# EAGLE board AutoPad-R2-RevA-Pads (EAGLE 9.6.1), part 1 of 91
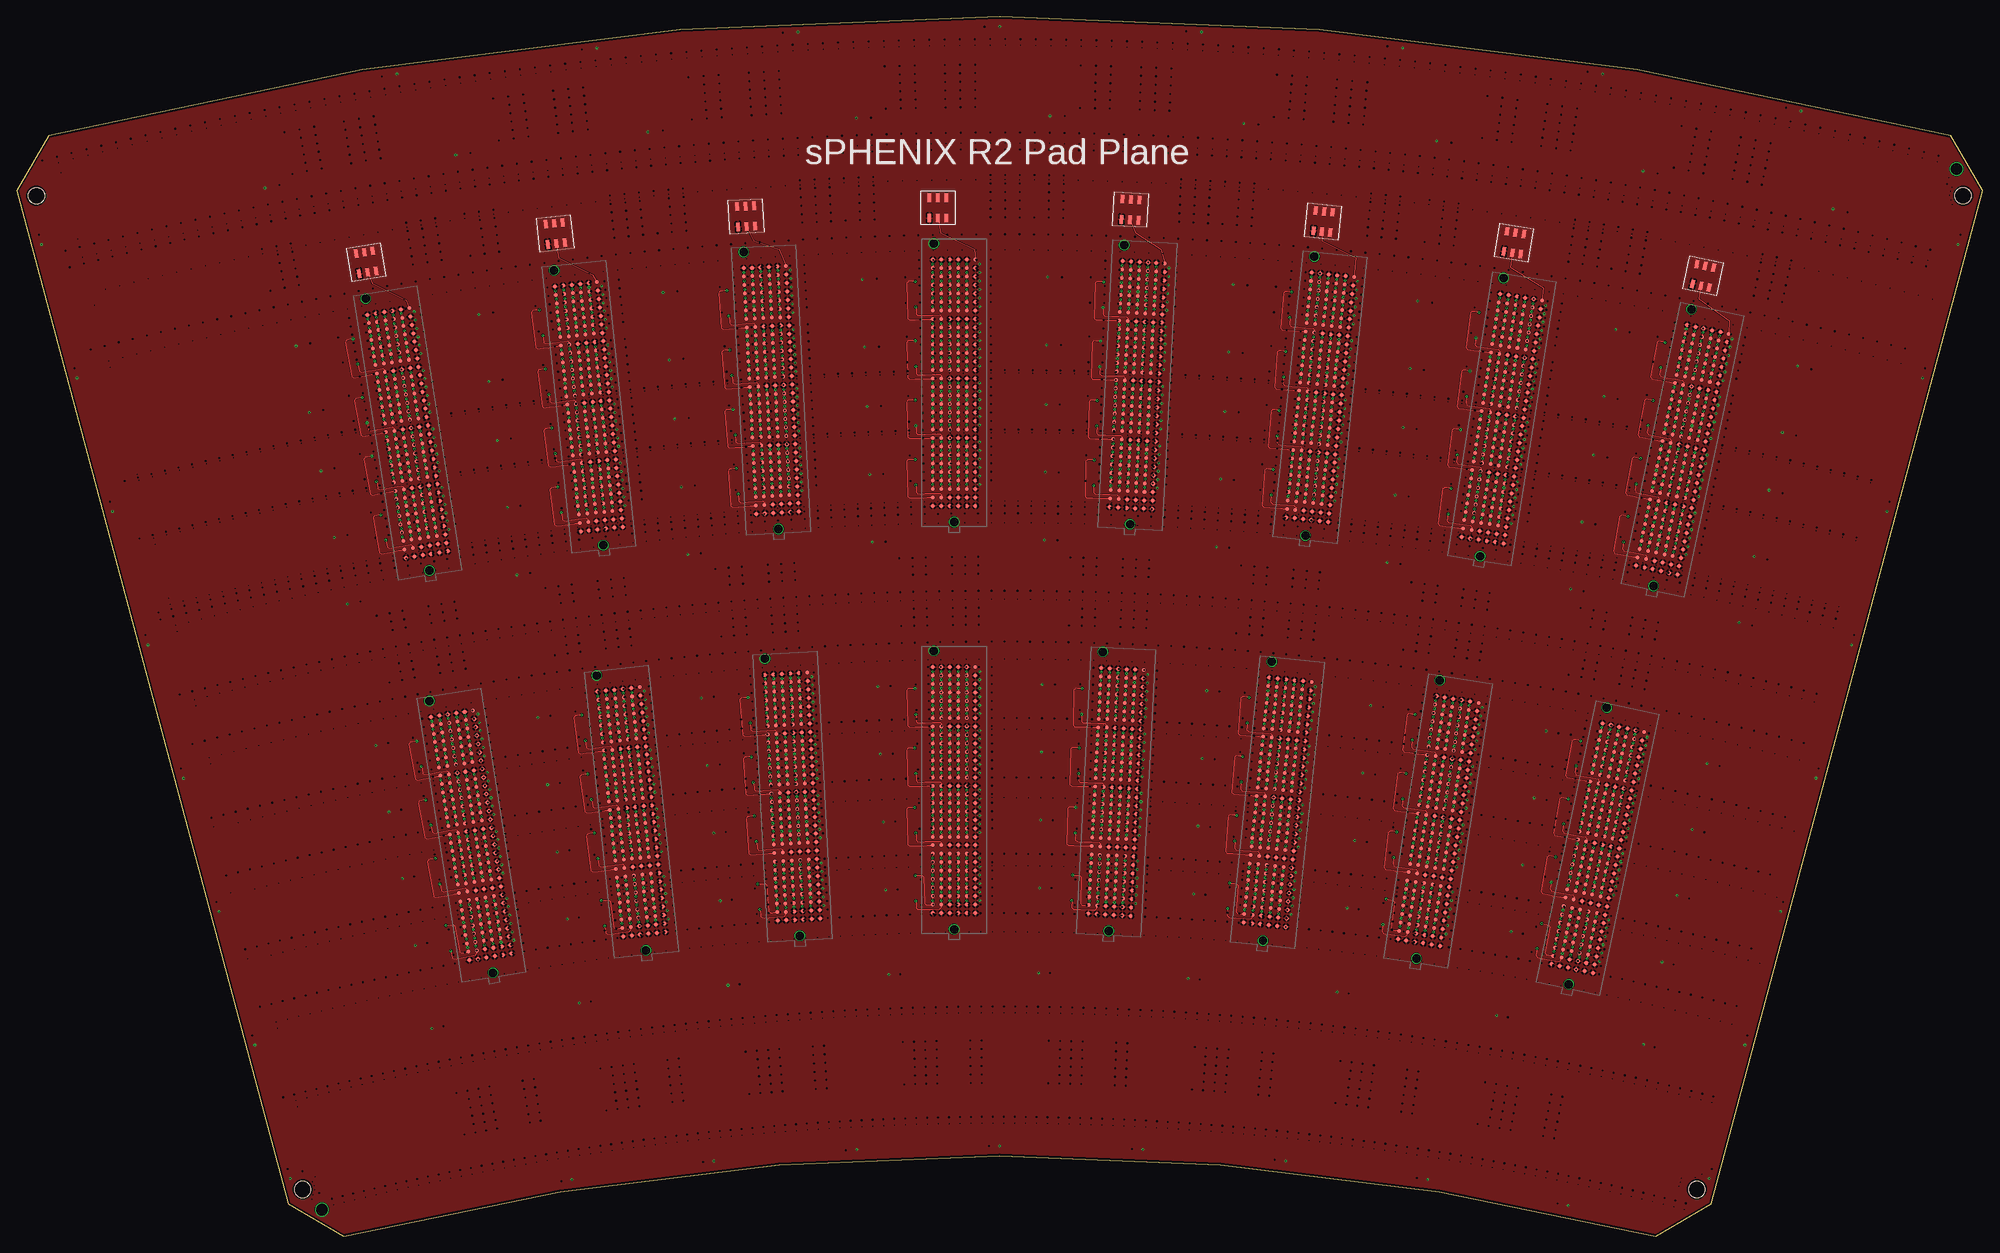
[diagram p0: board, top side]
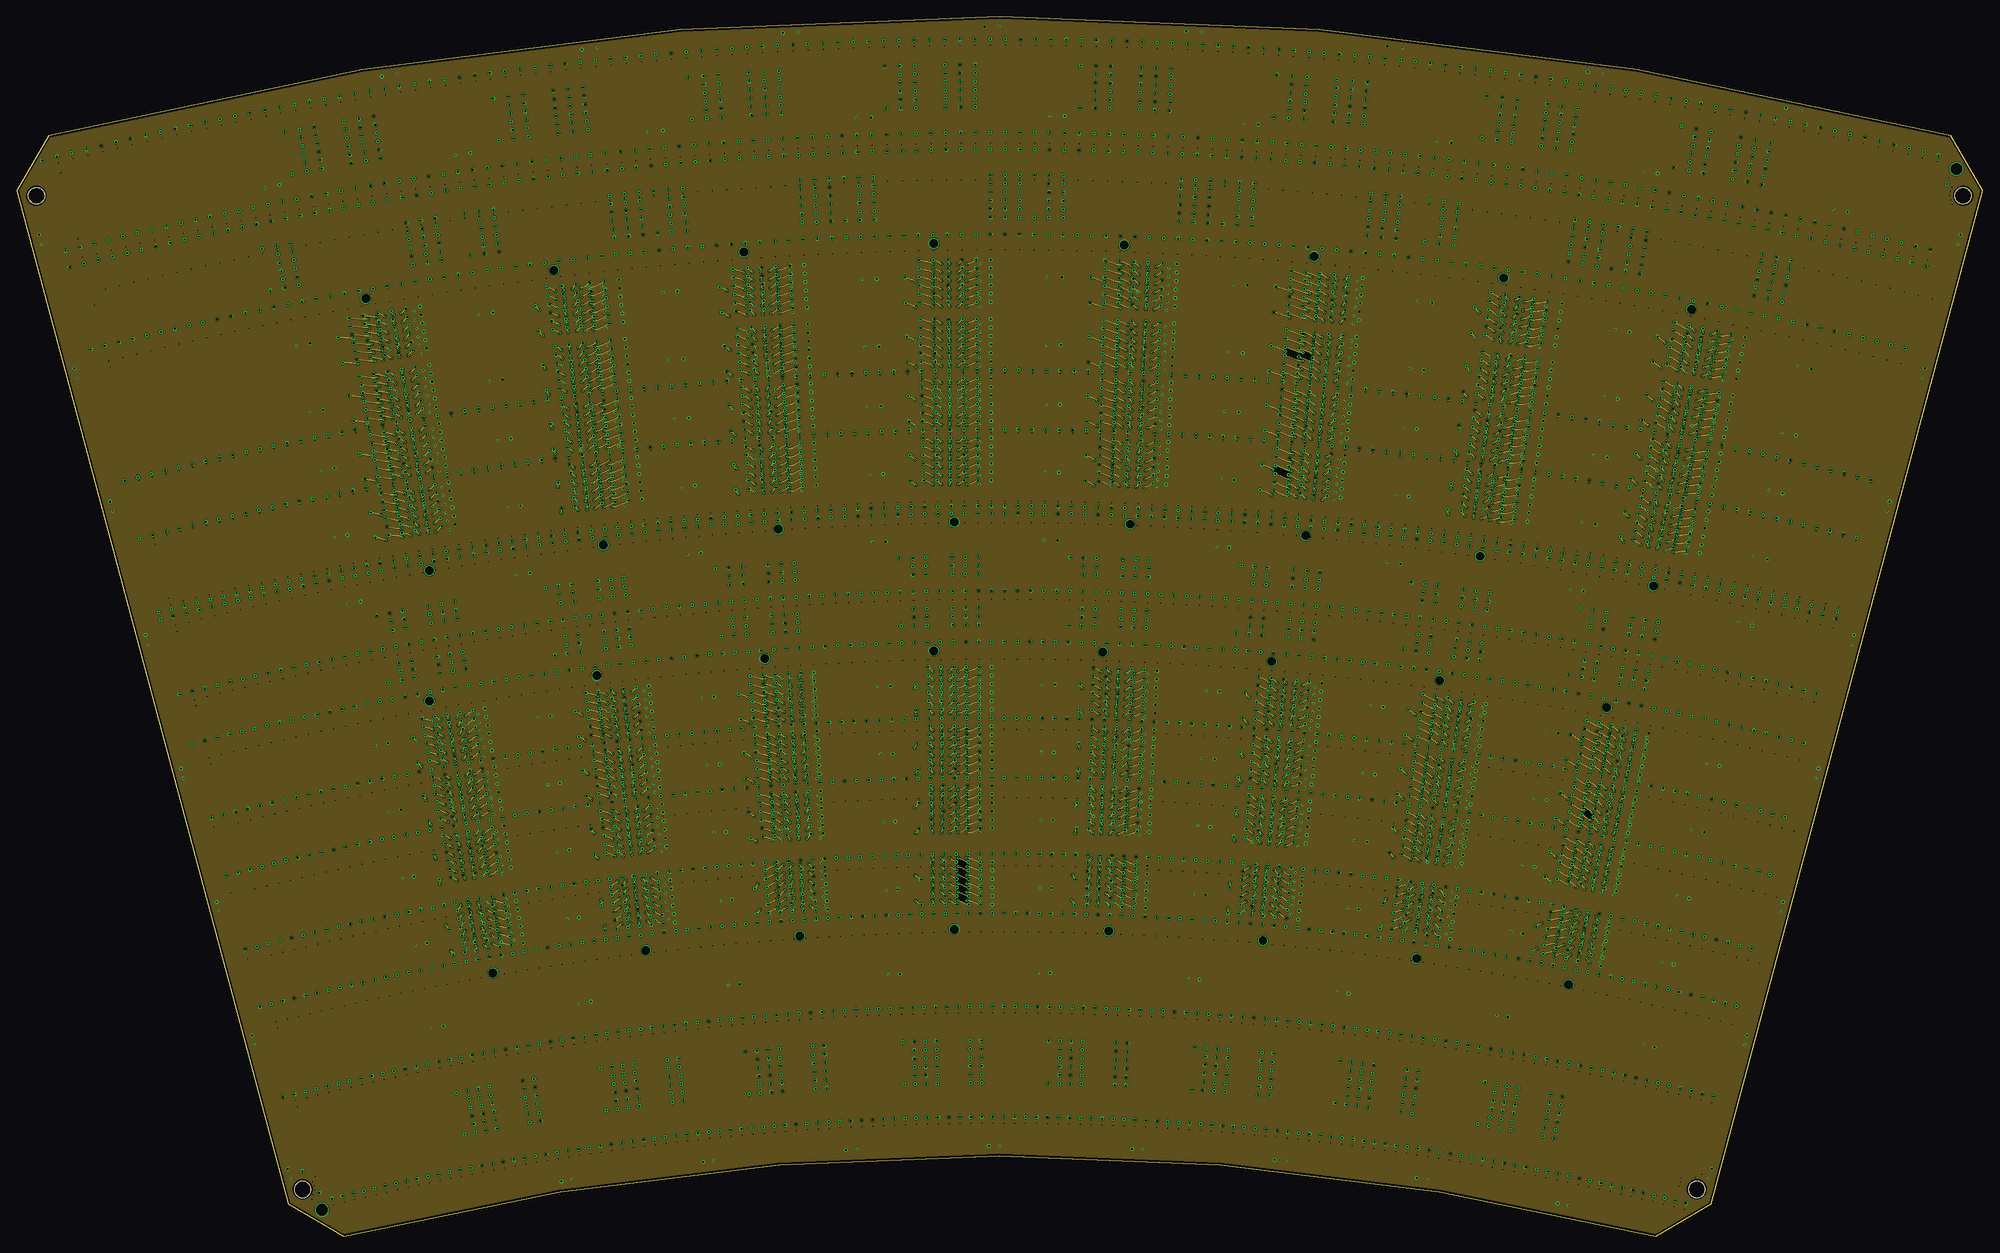
[diagram p1: board, inner layer Route2]
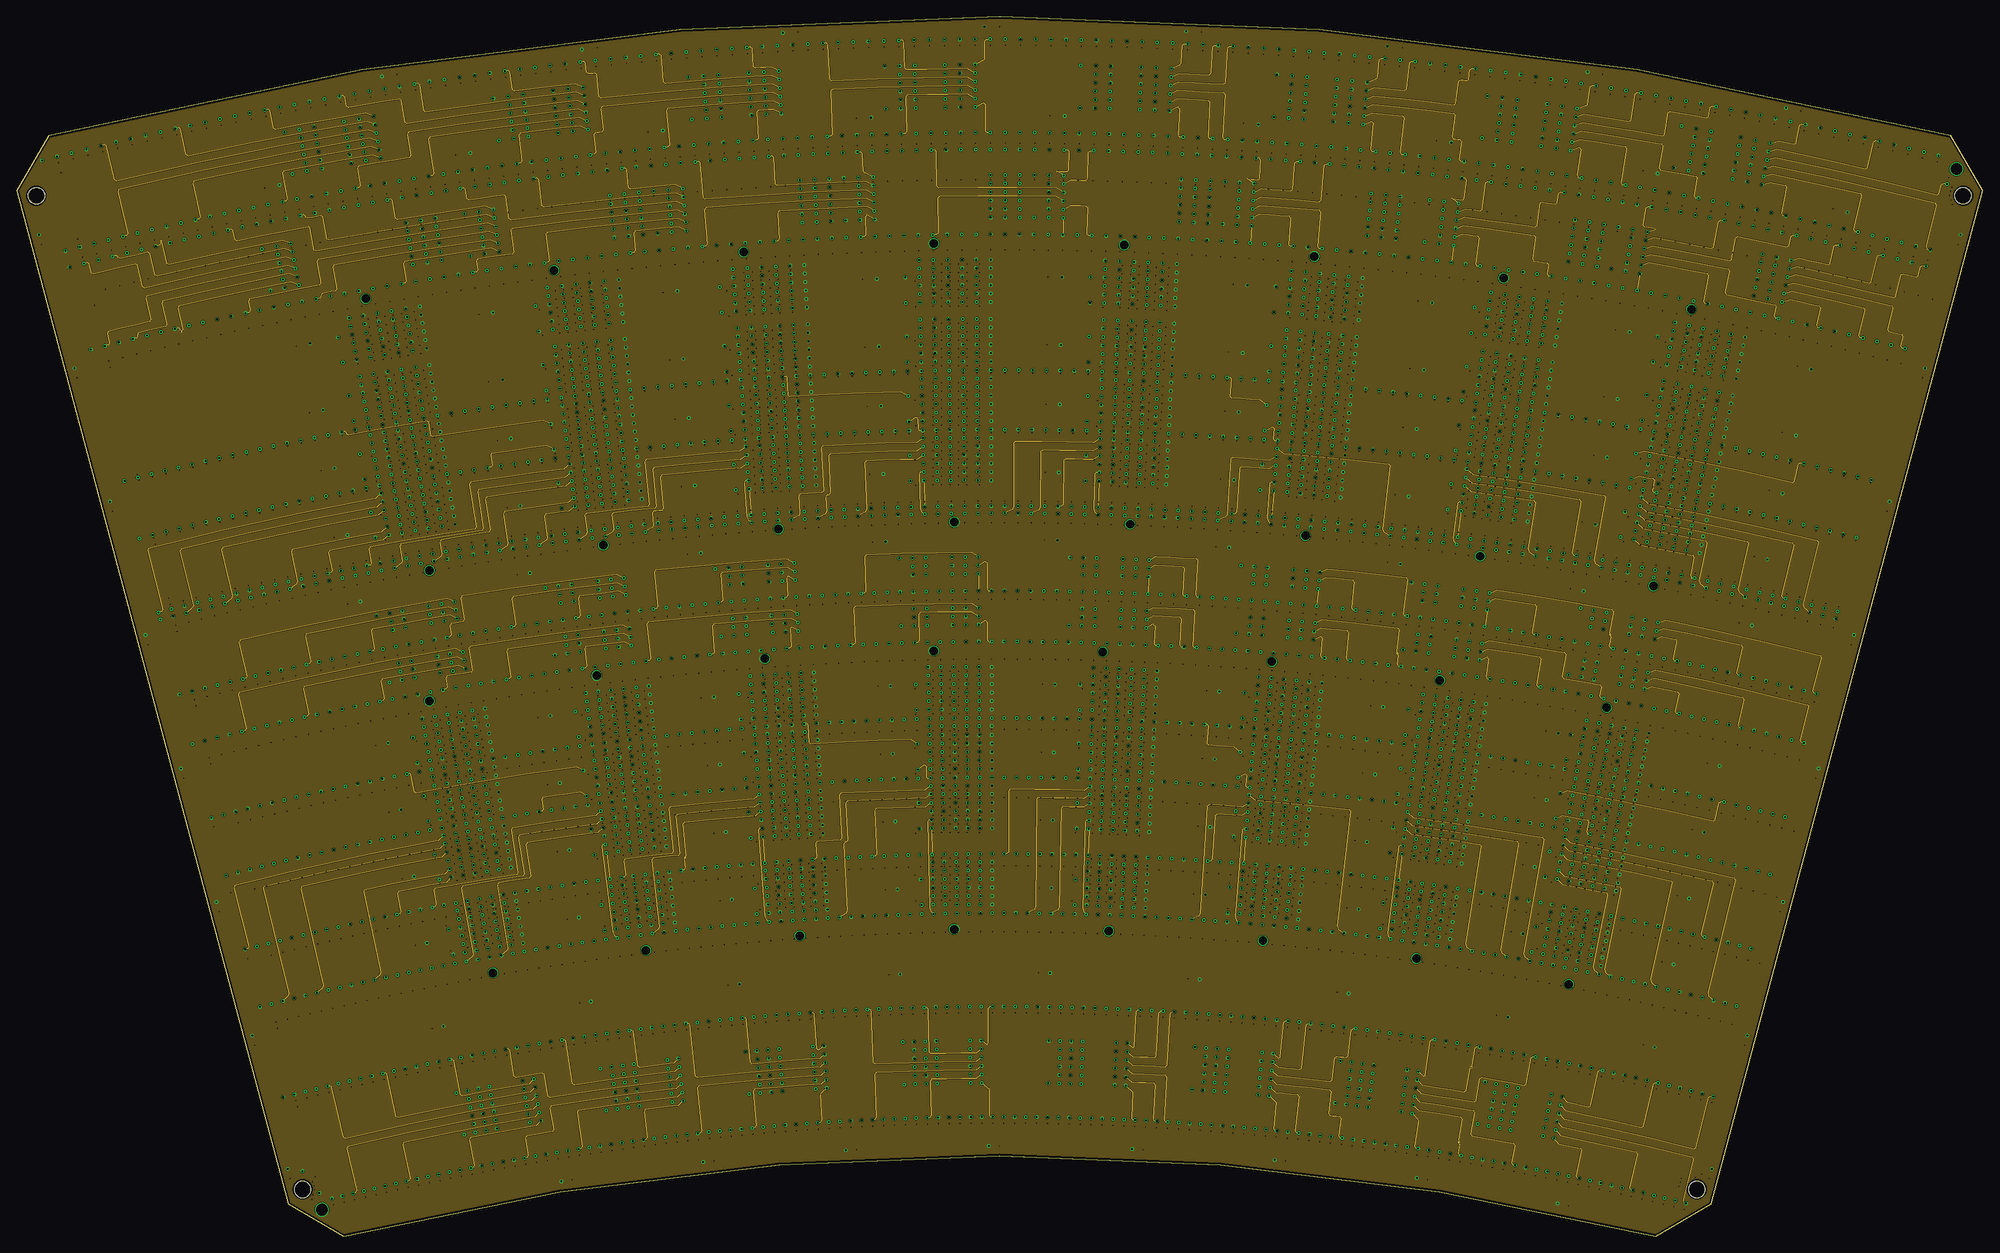
[diagram p2: board, inner layer Route3]
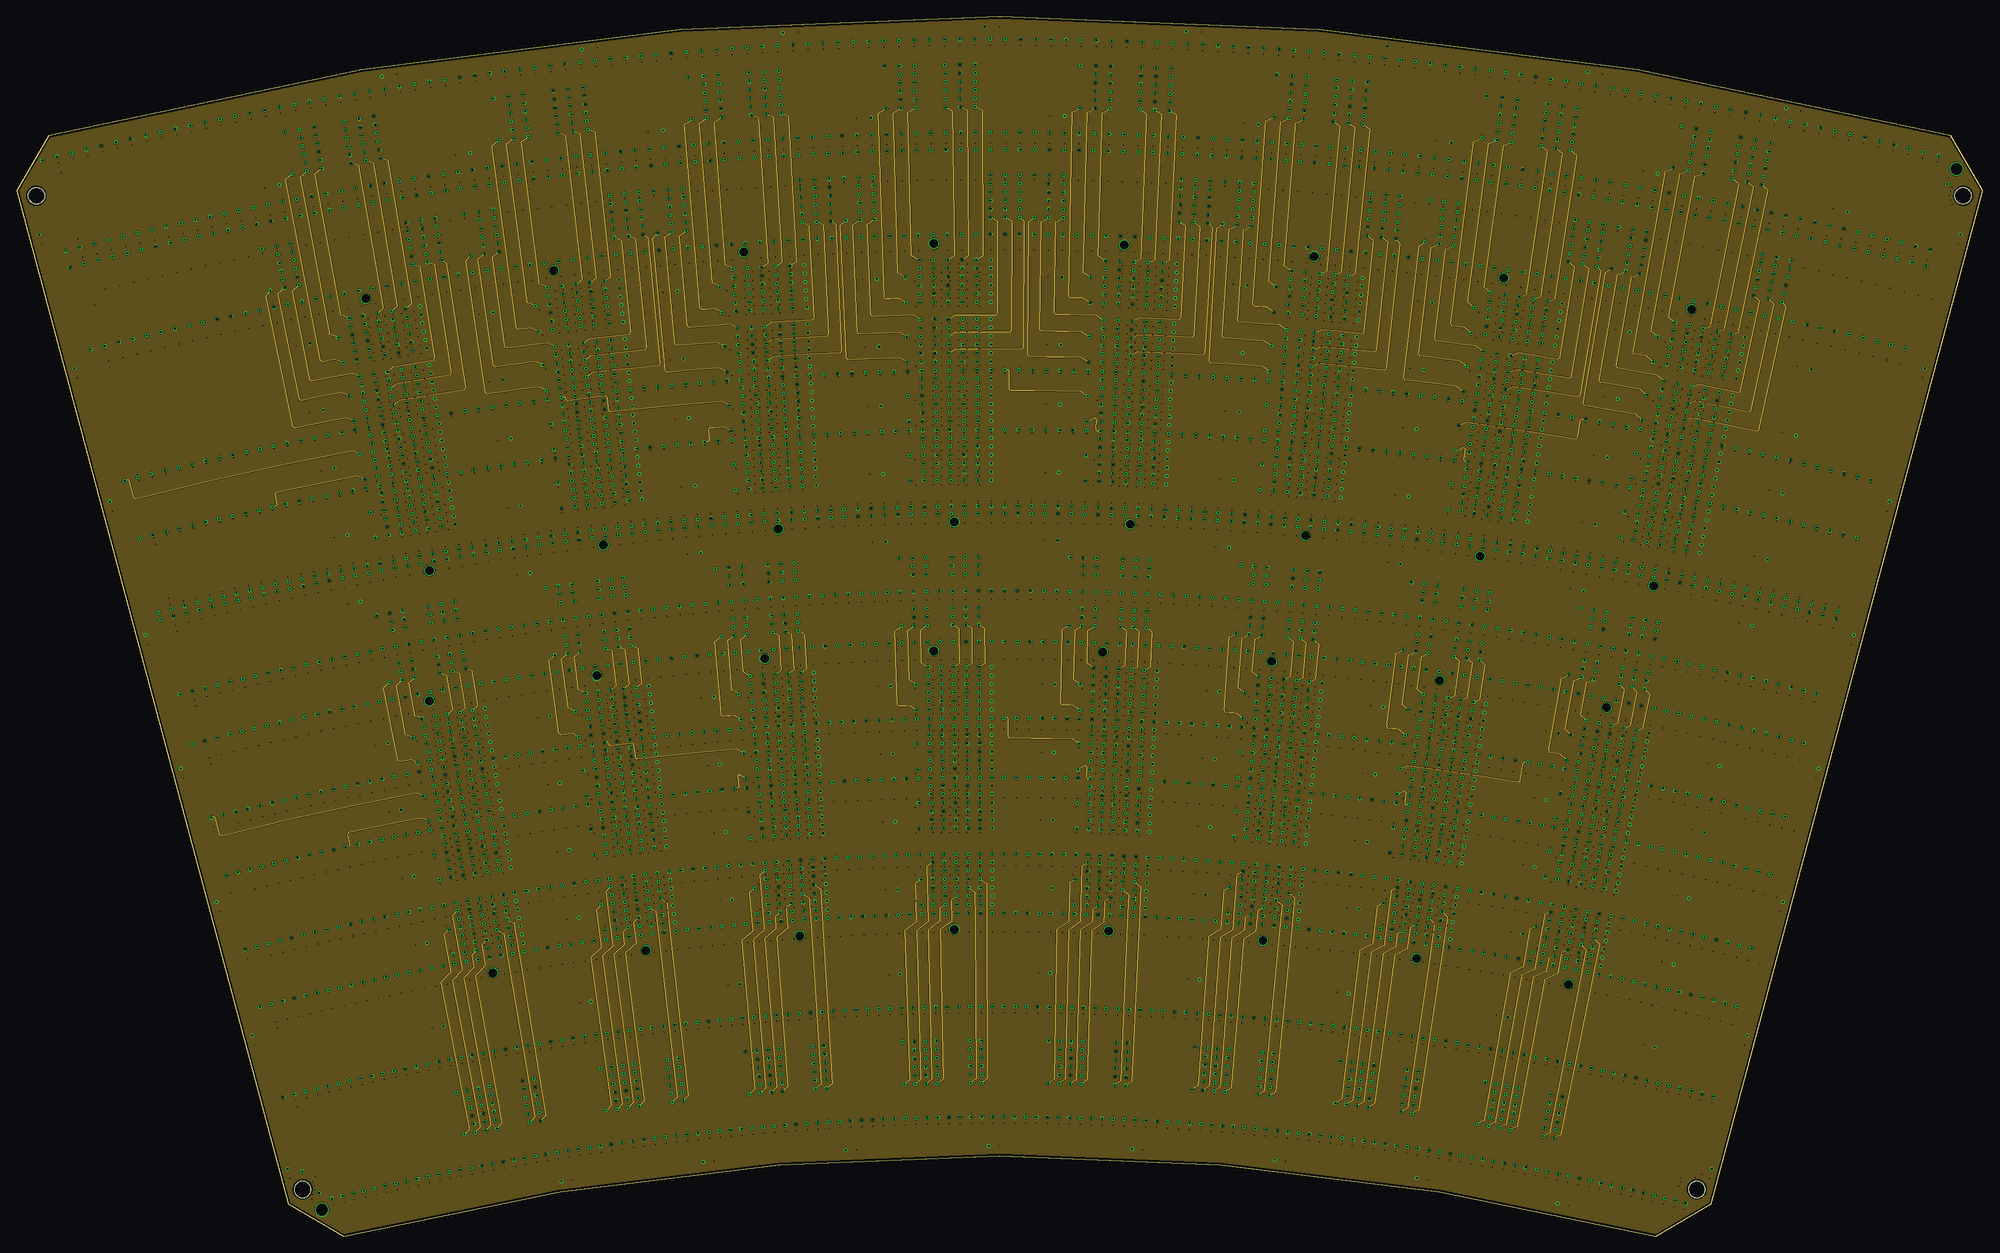
[diagram p3: board, inner layer Route4]
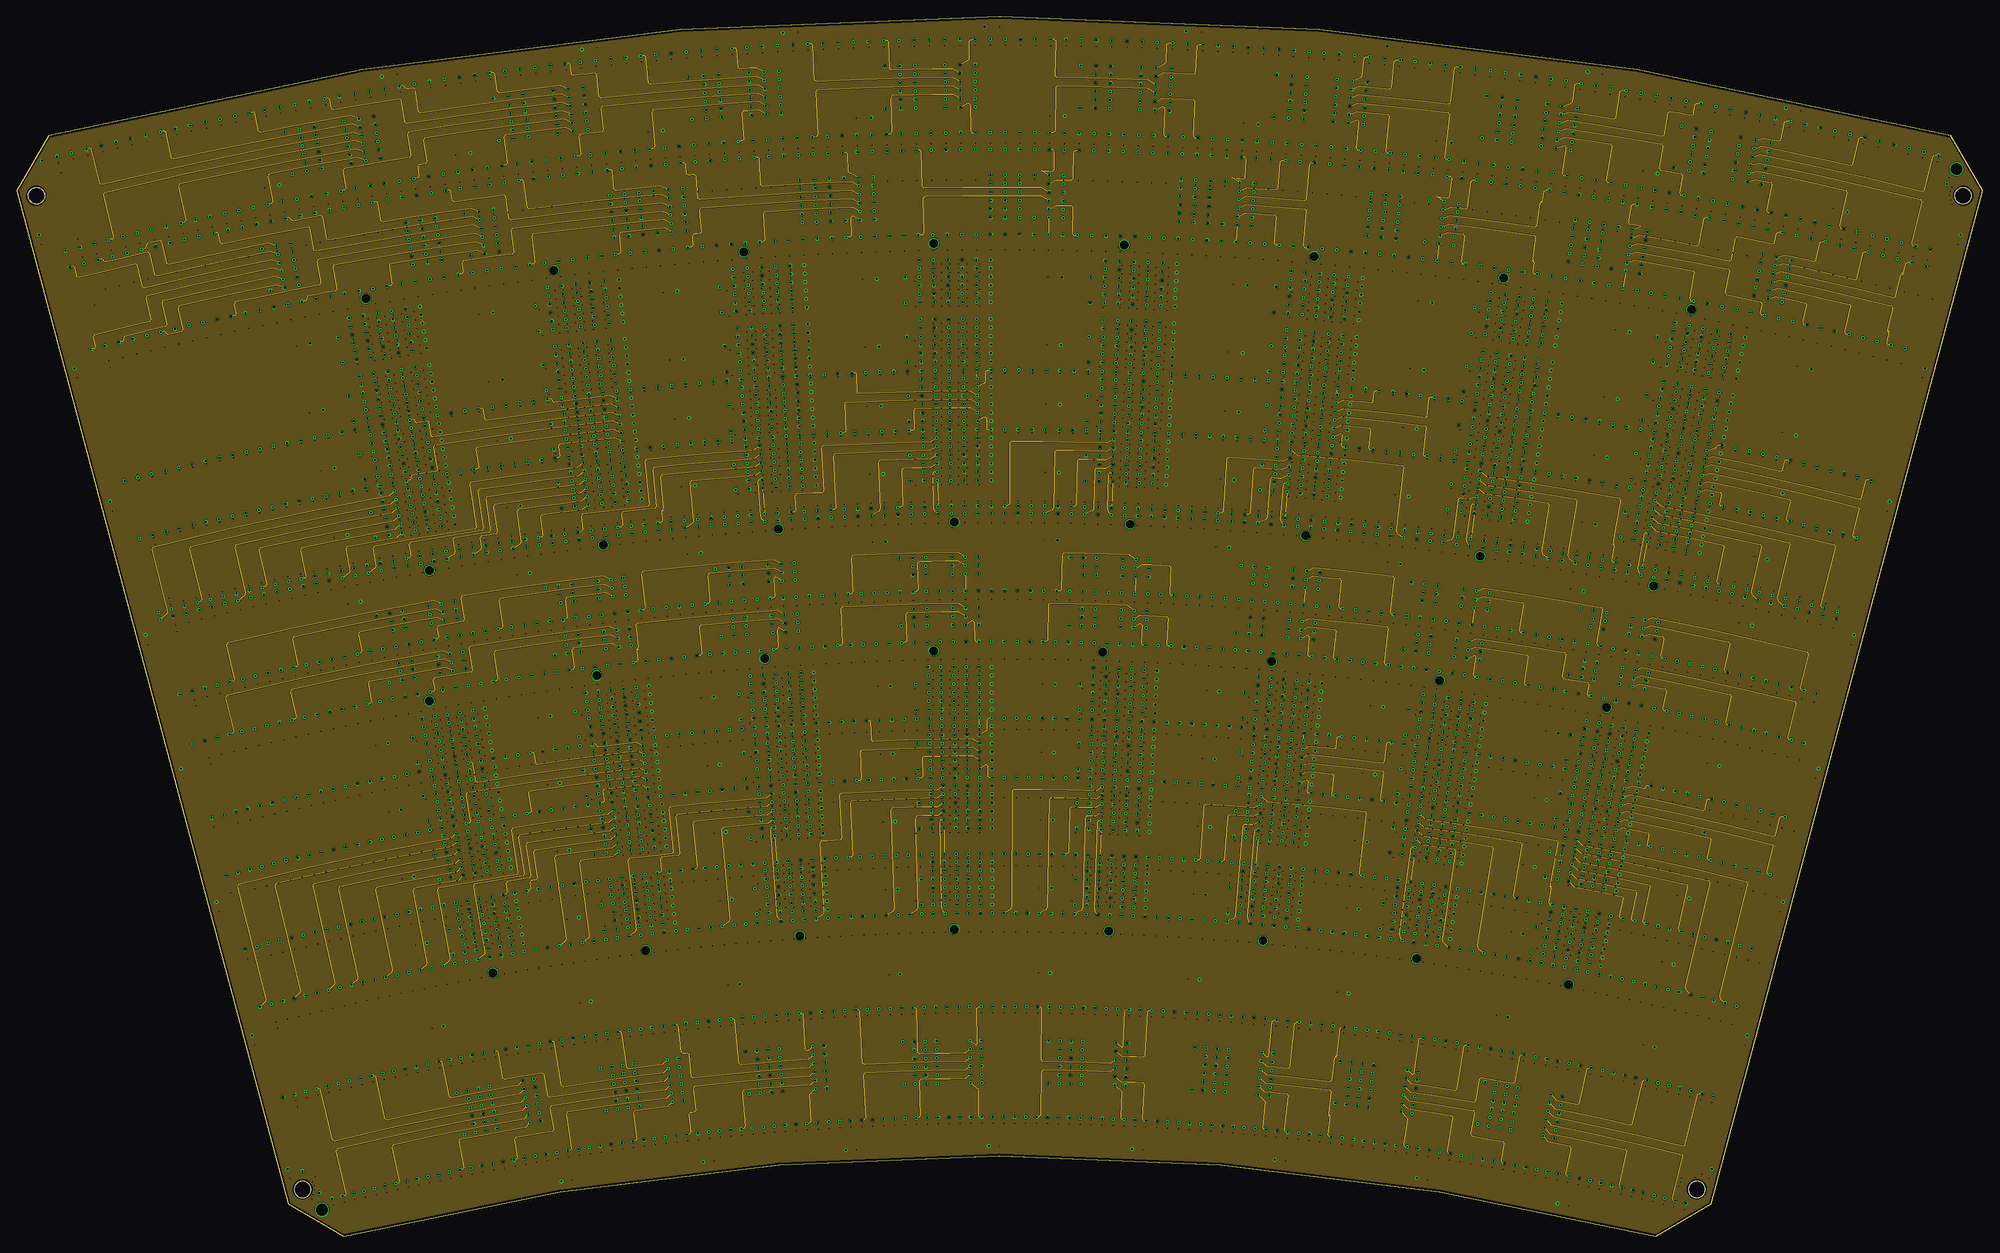
[diagram p4: board, inner layer Route5]
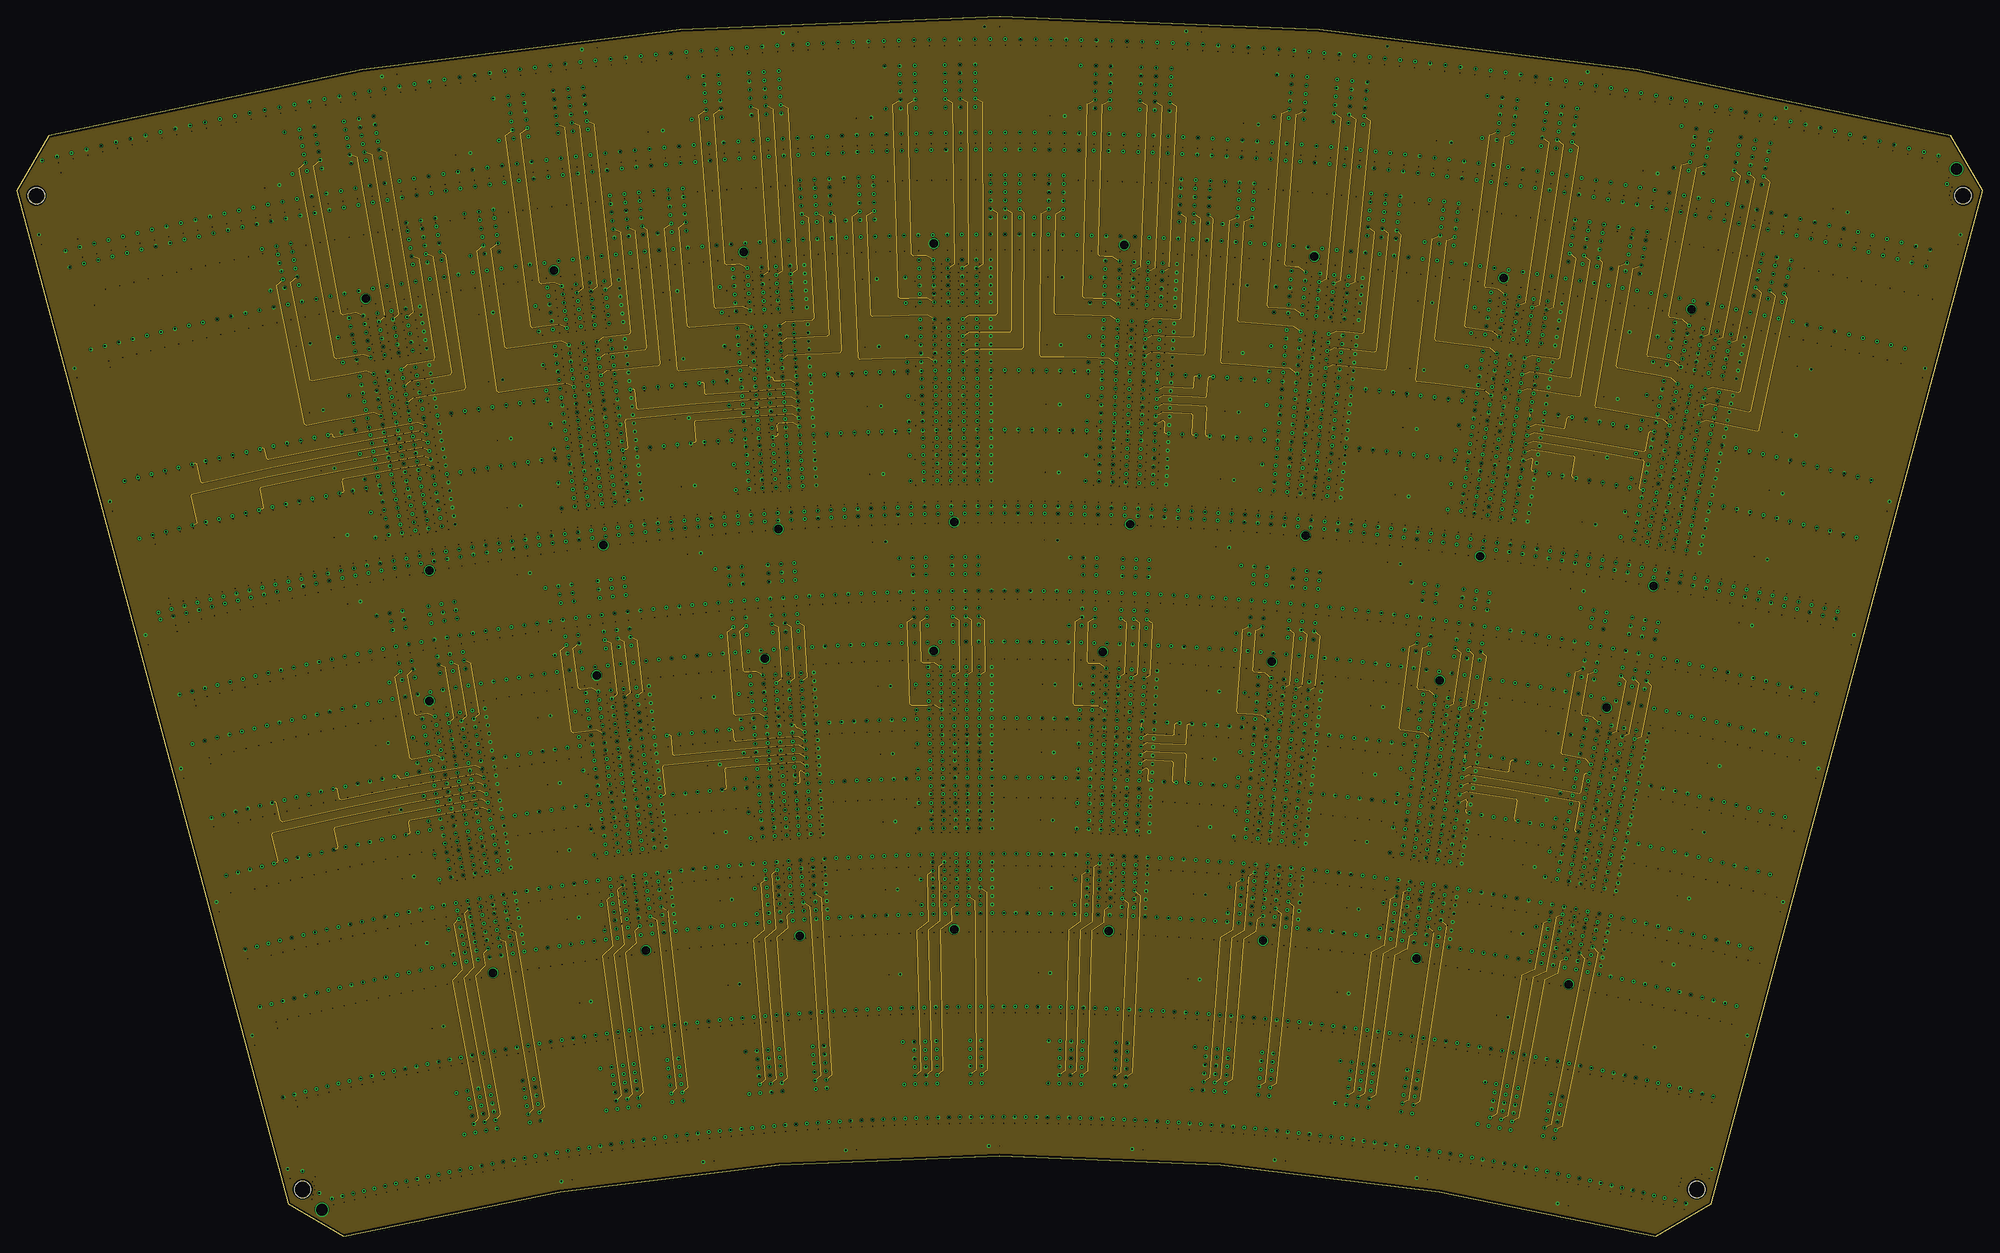
[diagram p5: board, inner layer Route6]
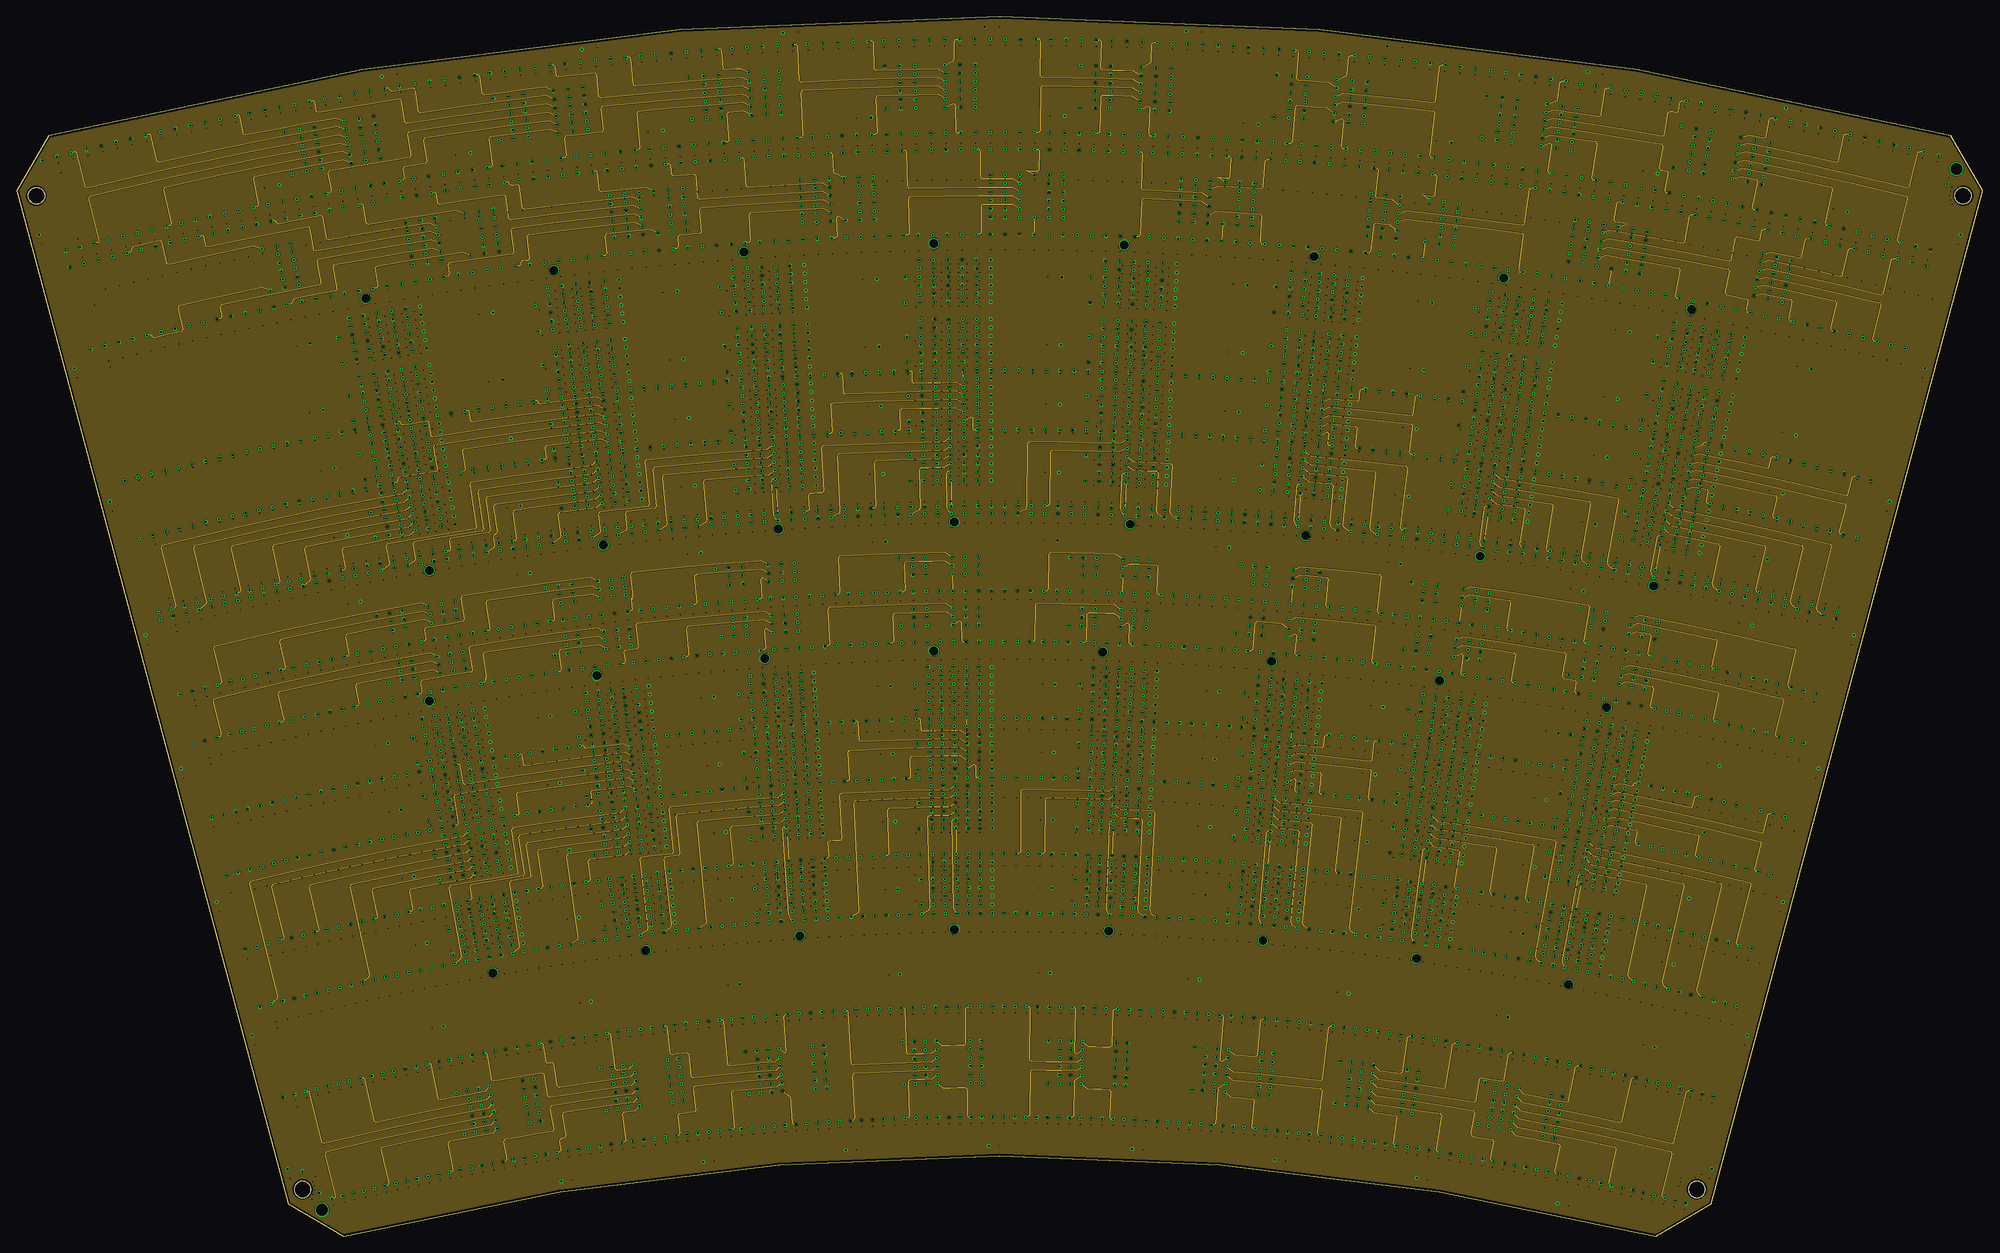
[diagram p6: board, inner layer Route7]
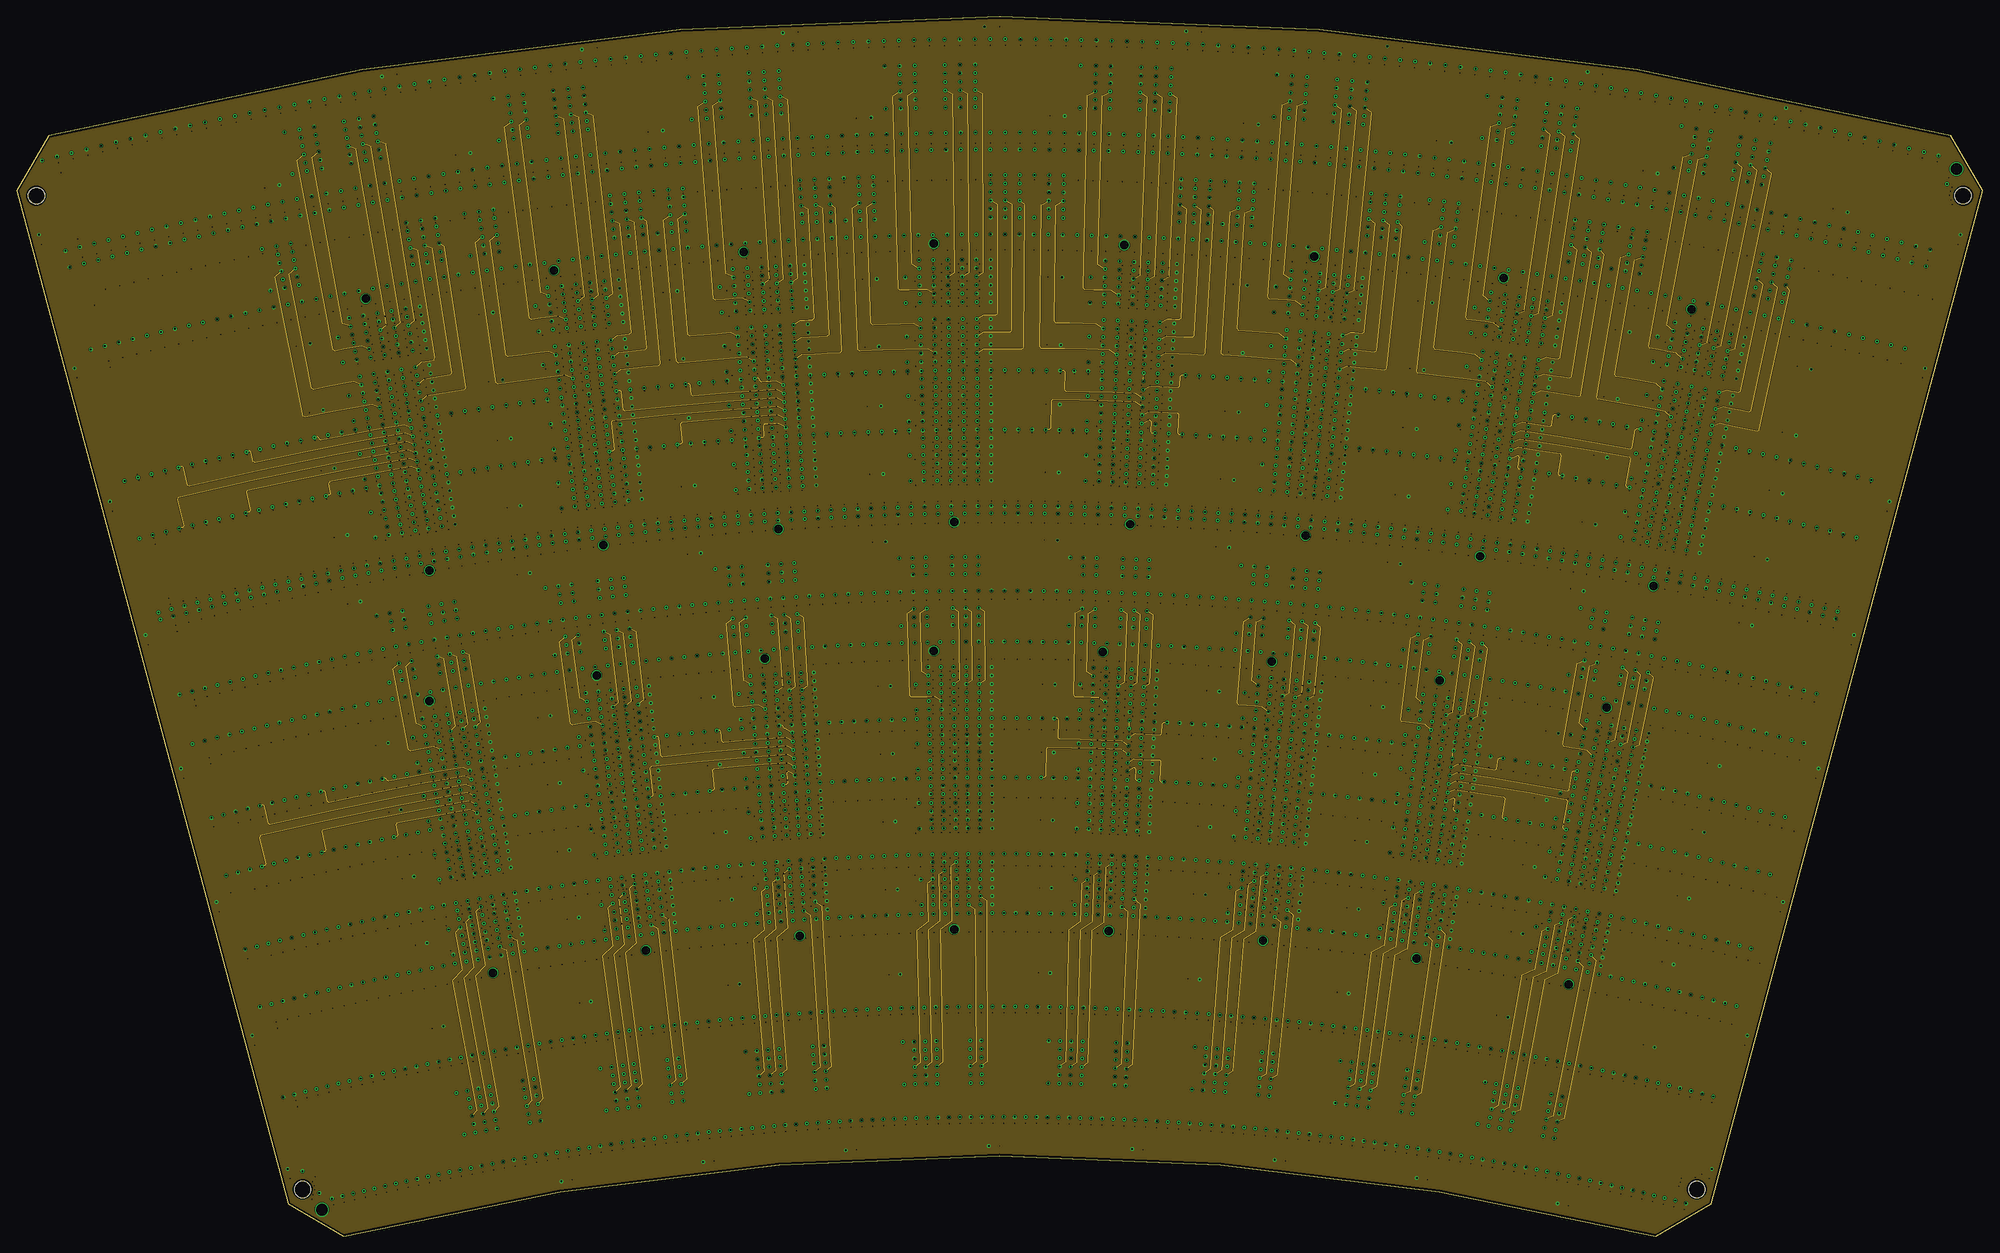
[diagram p7: board, inner layer Route8]
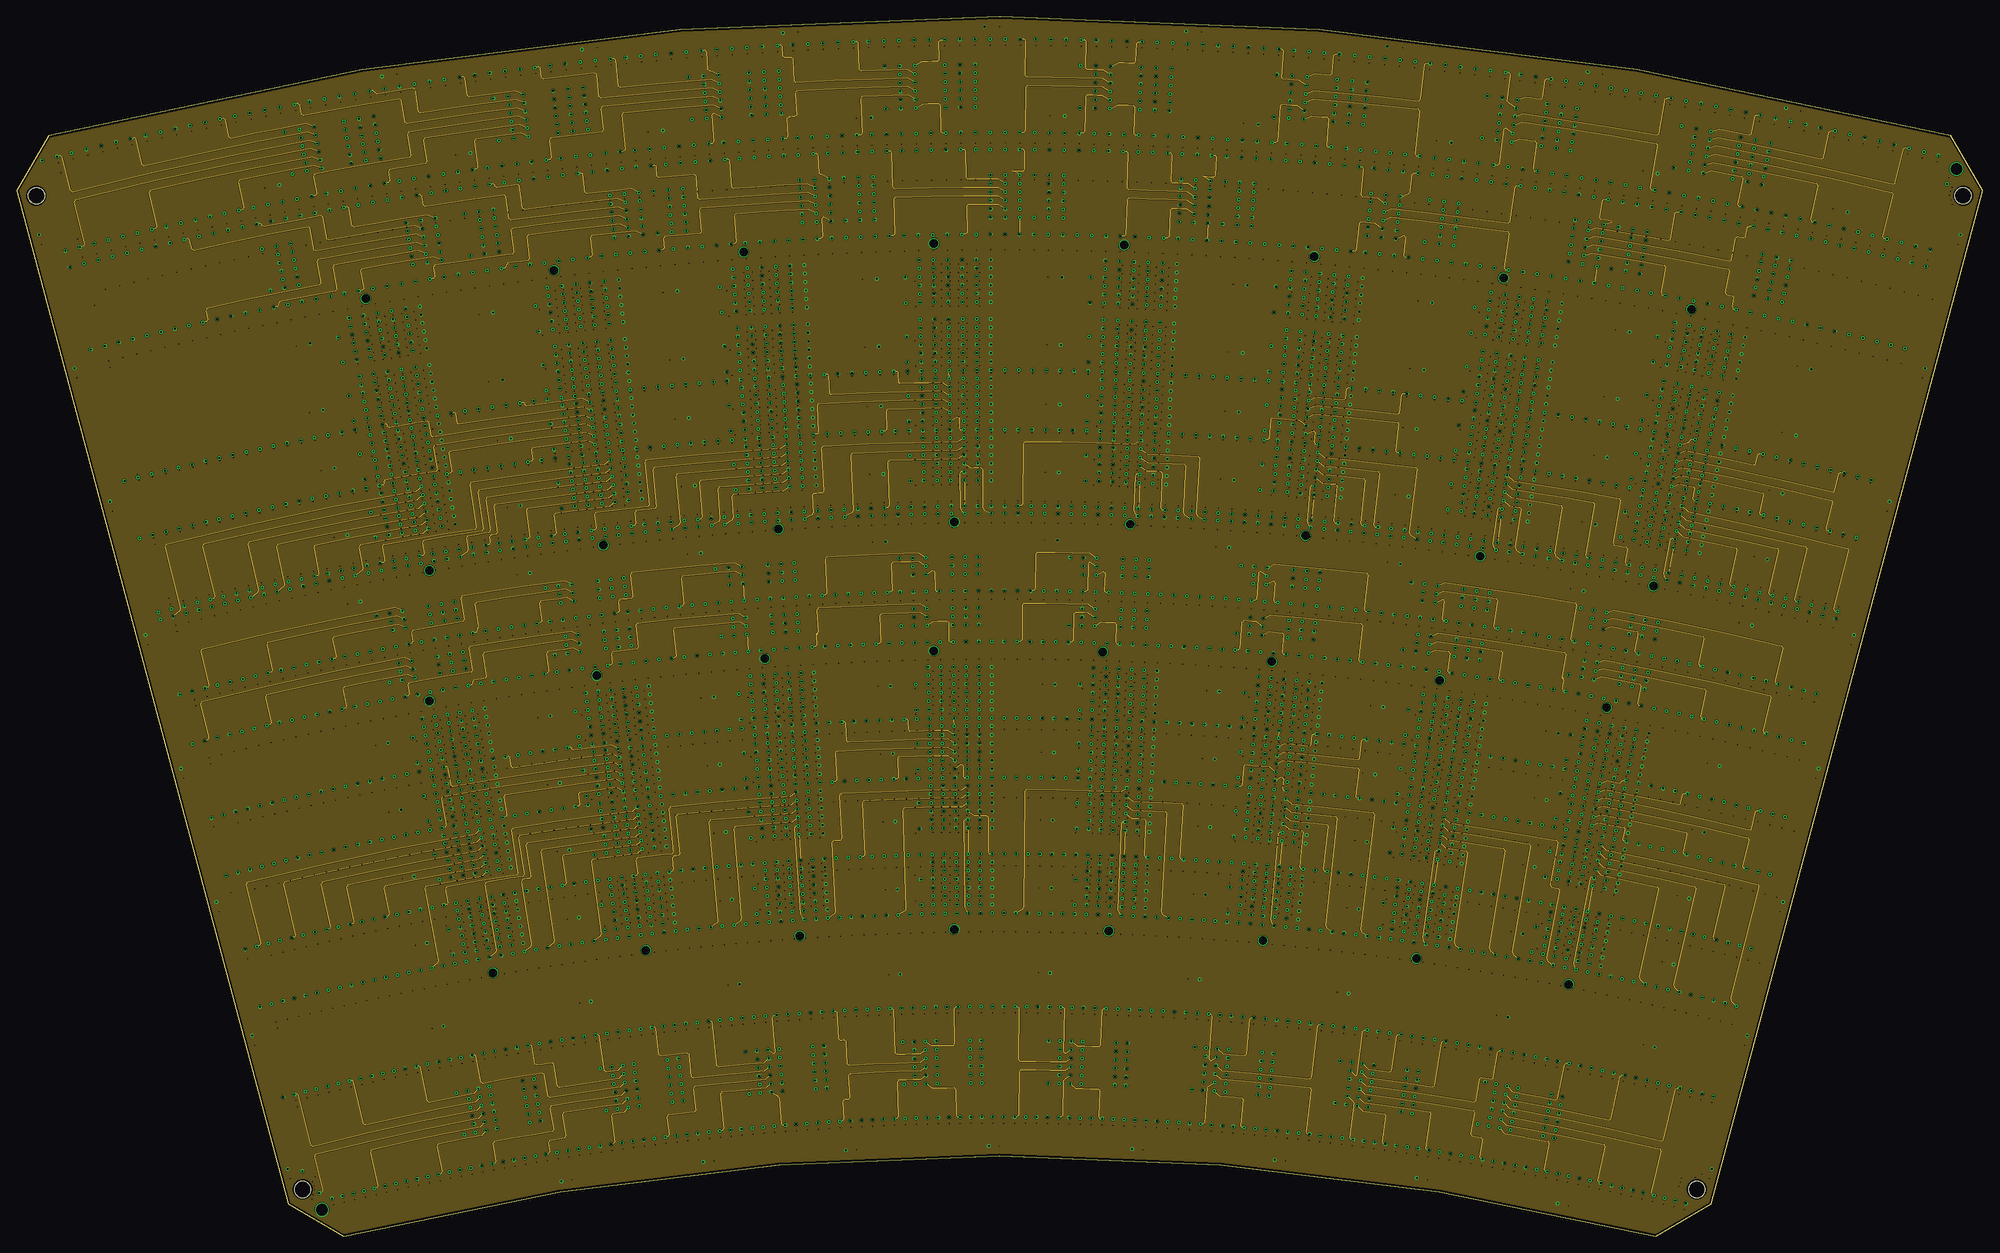
[diagram p8: board, inner layer Route9]
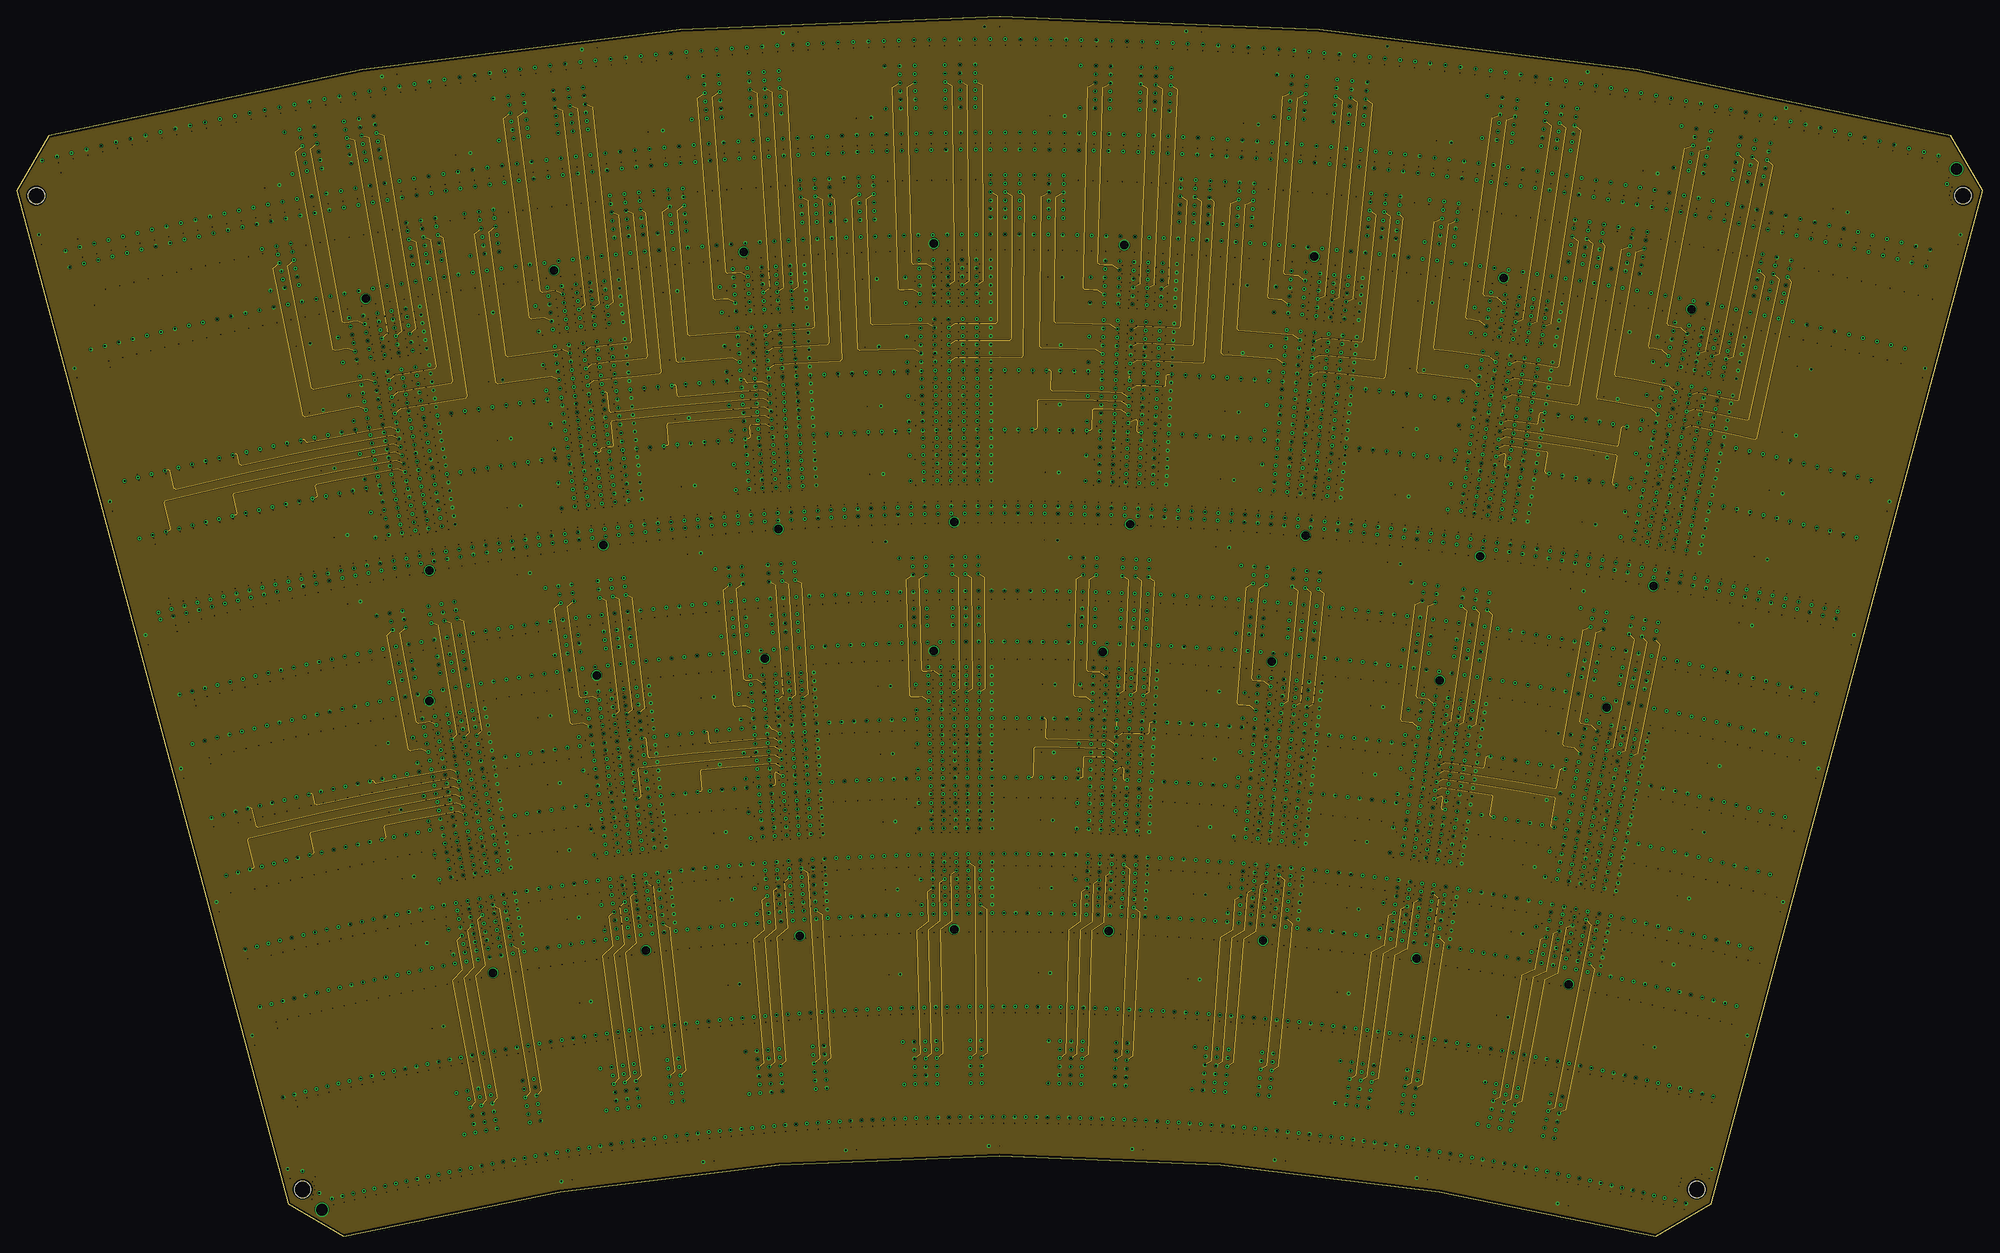
[diagram p9: board, inner layer Route10]
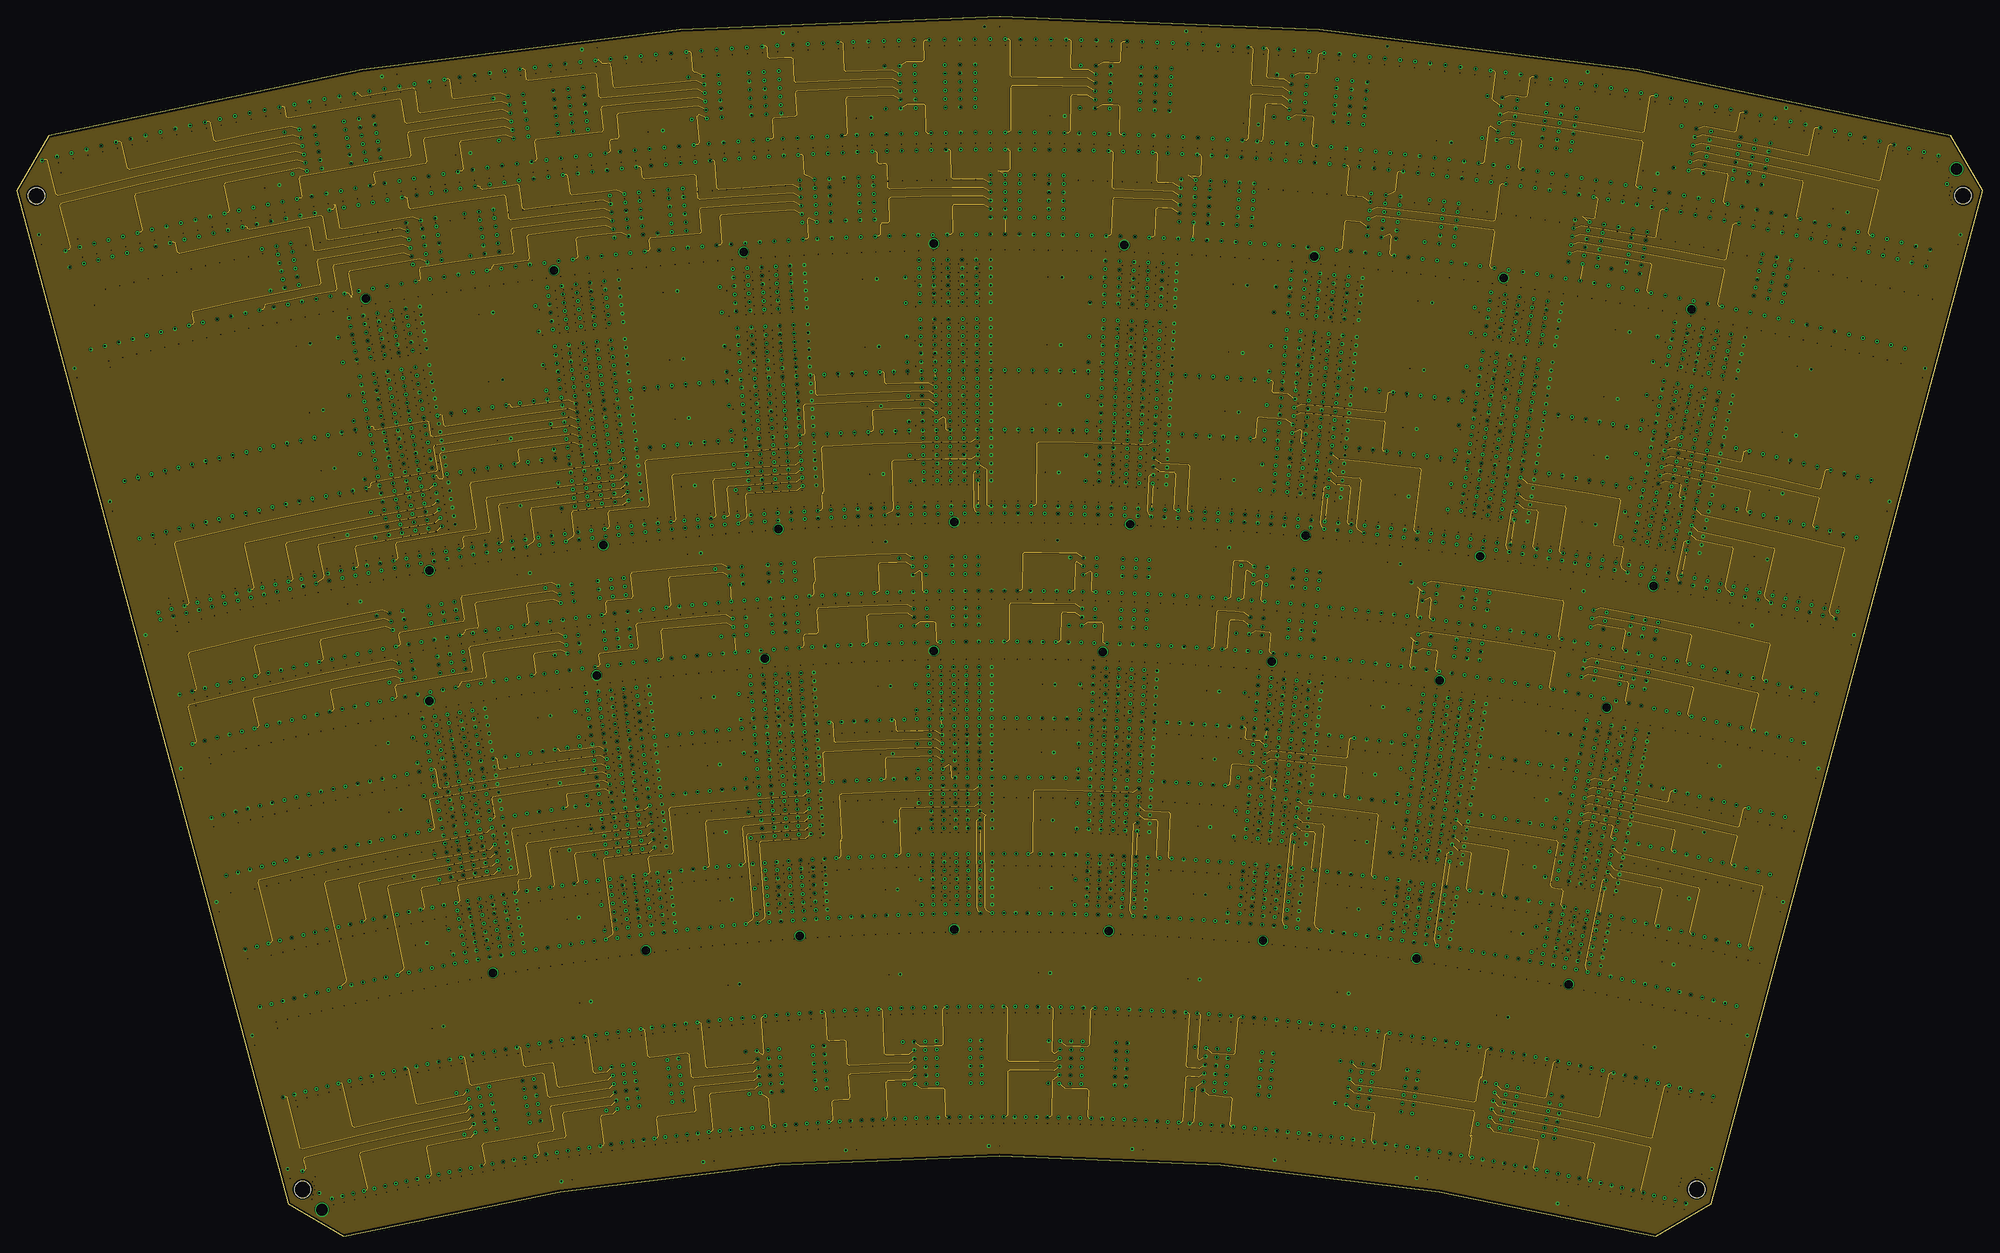
[diagram p10: board, inner layer Route11]
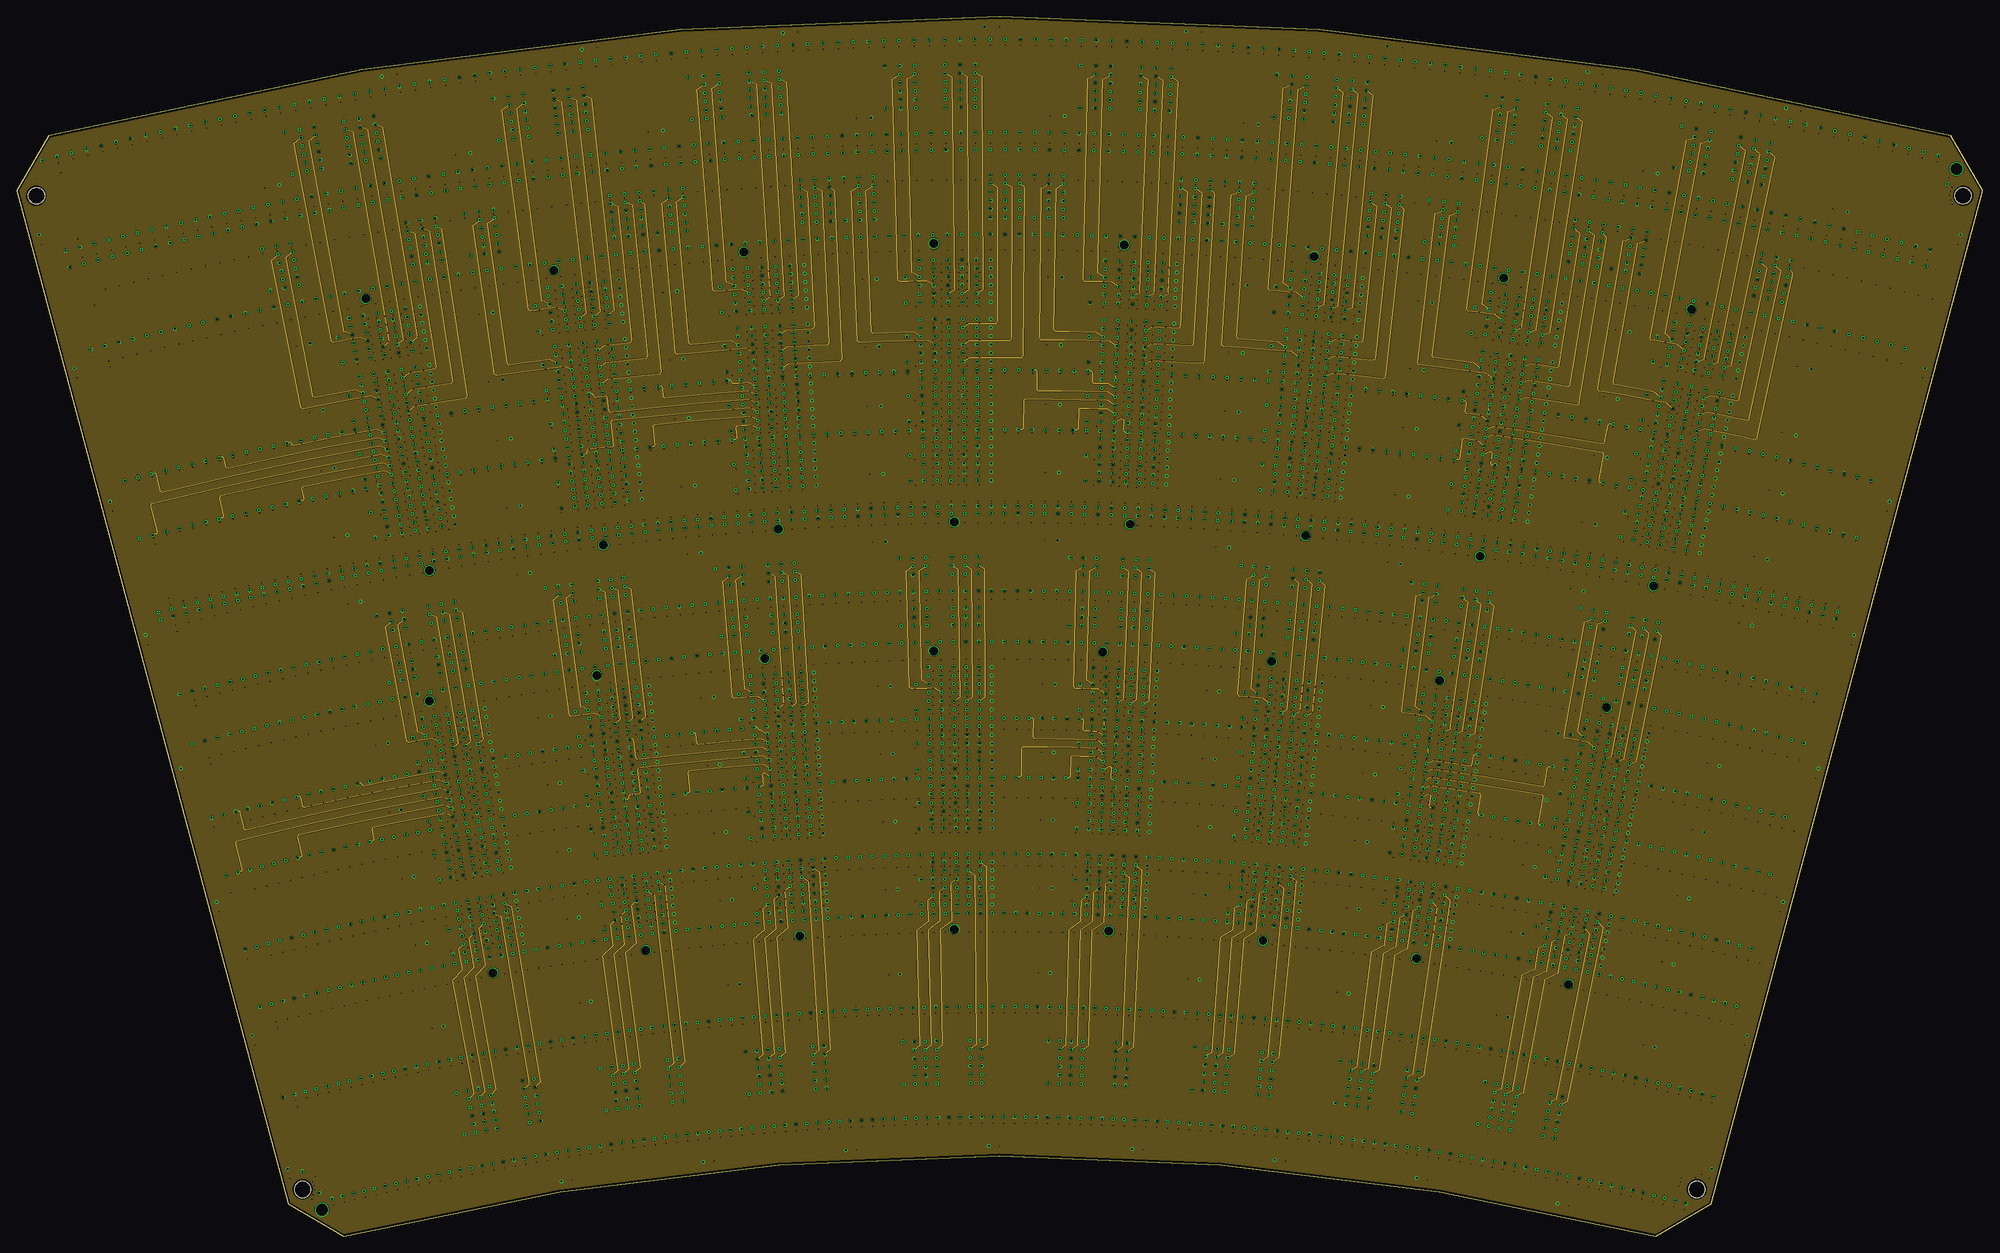
[diagram p11: board, inner layer Route12]
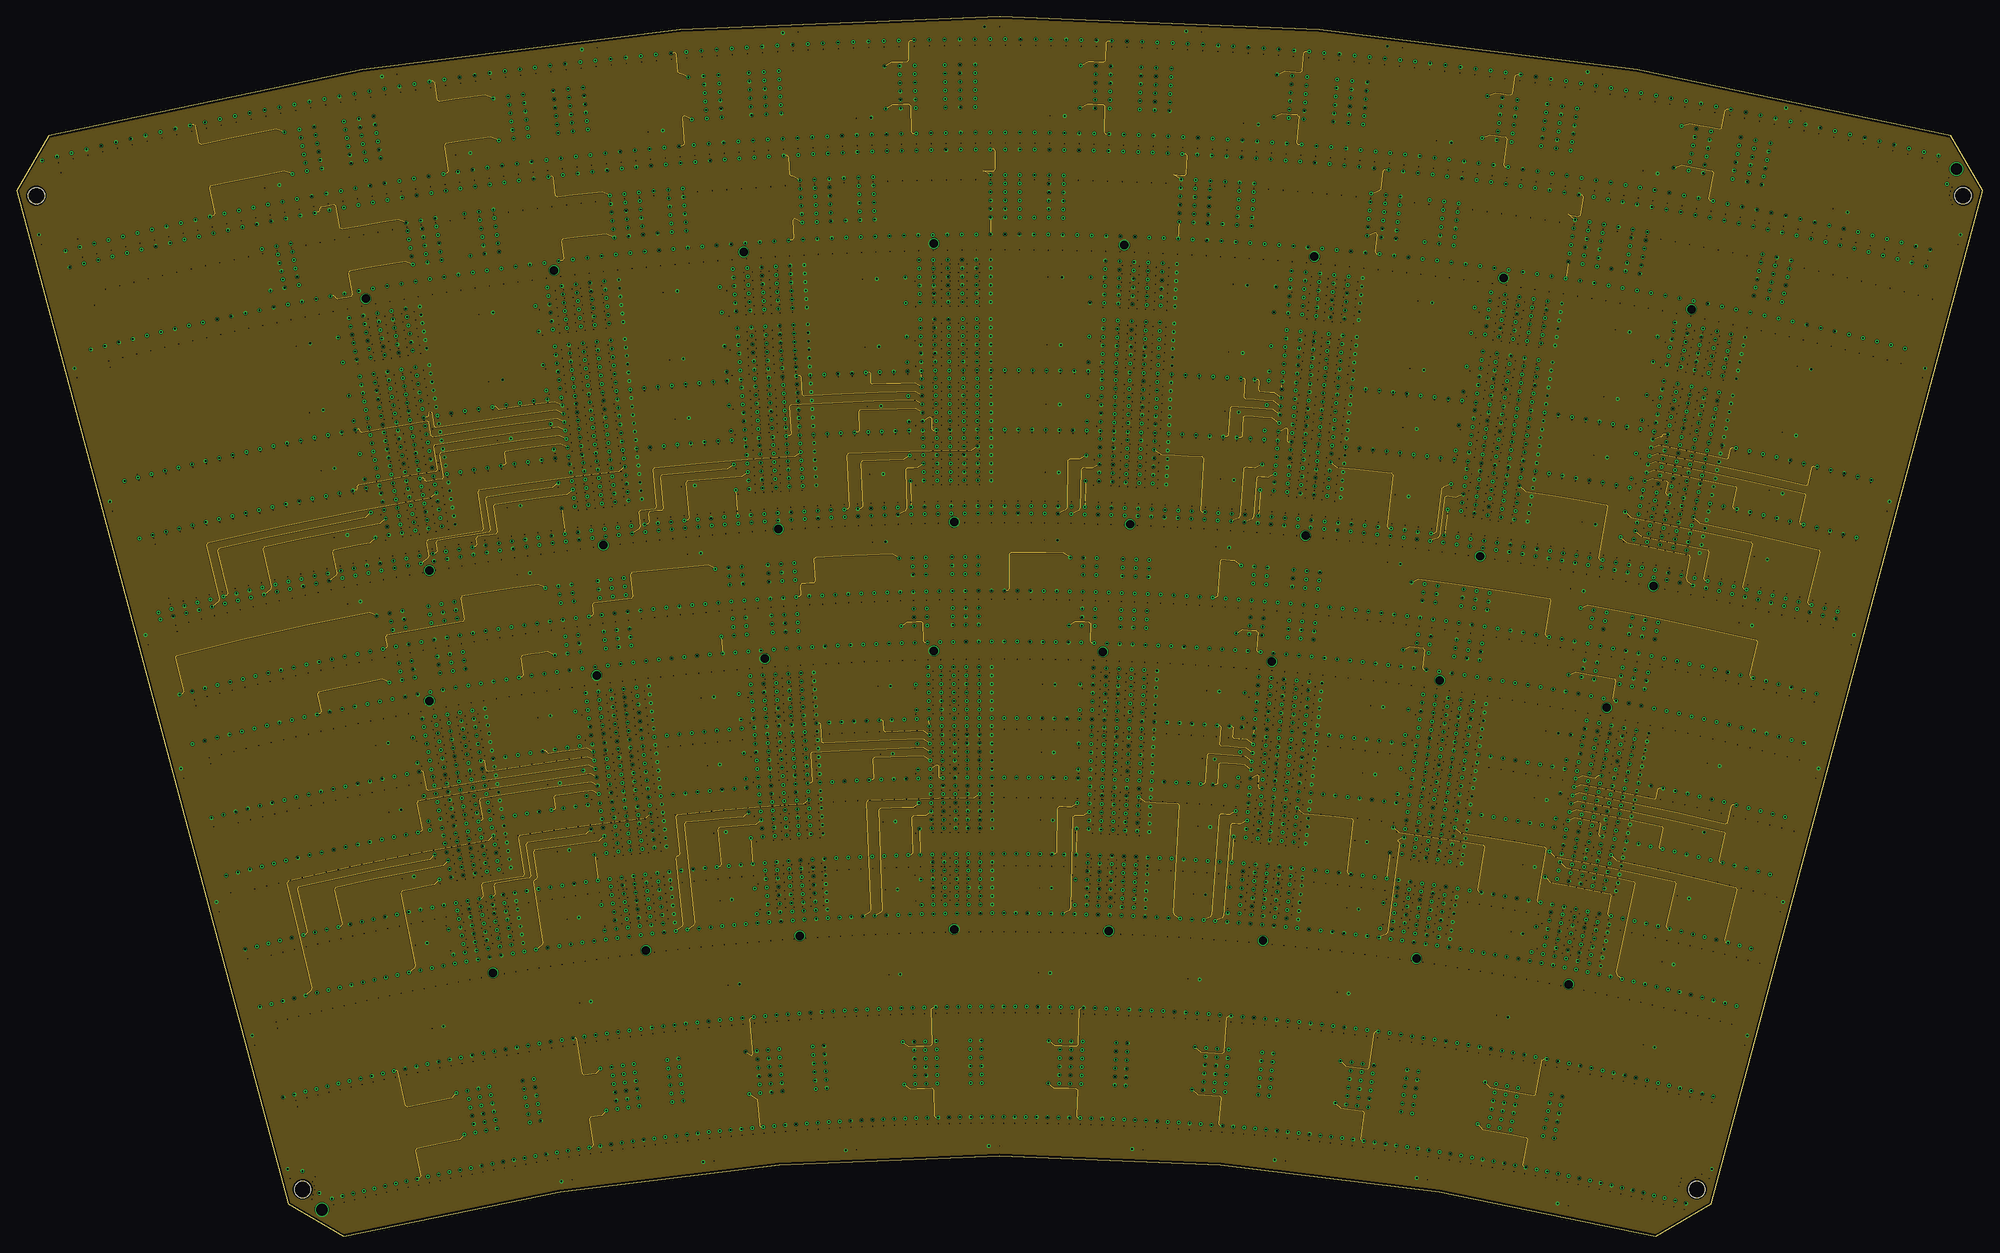
[diagram p12: board, inner layer Route13]
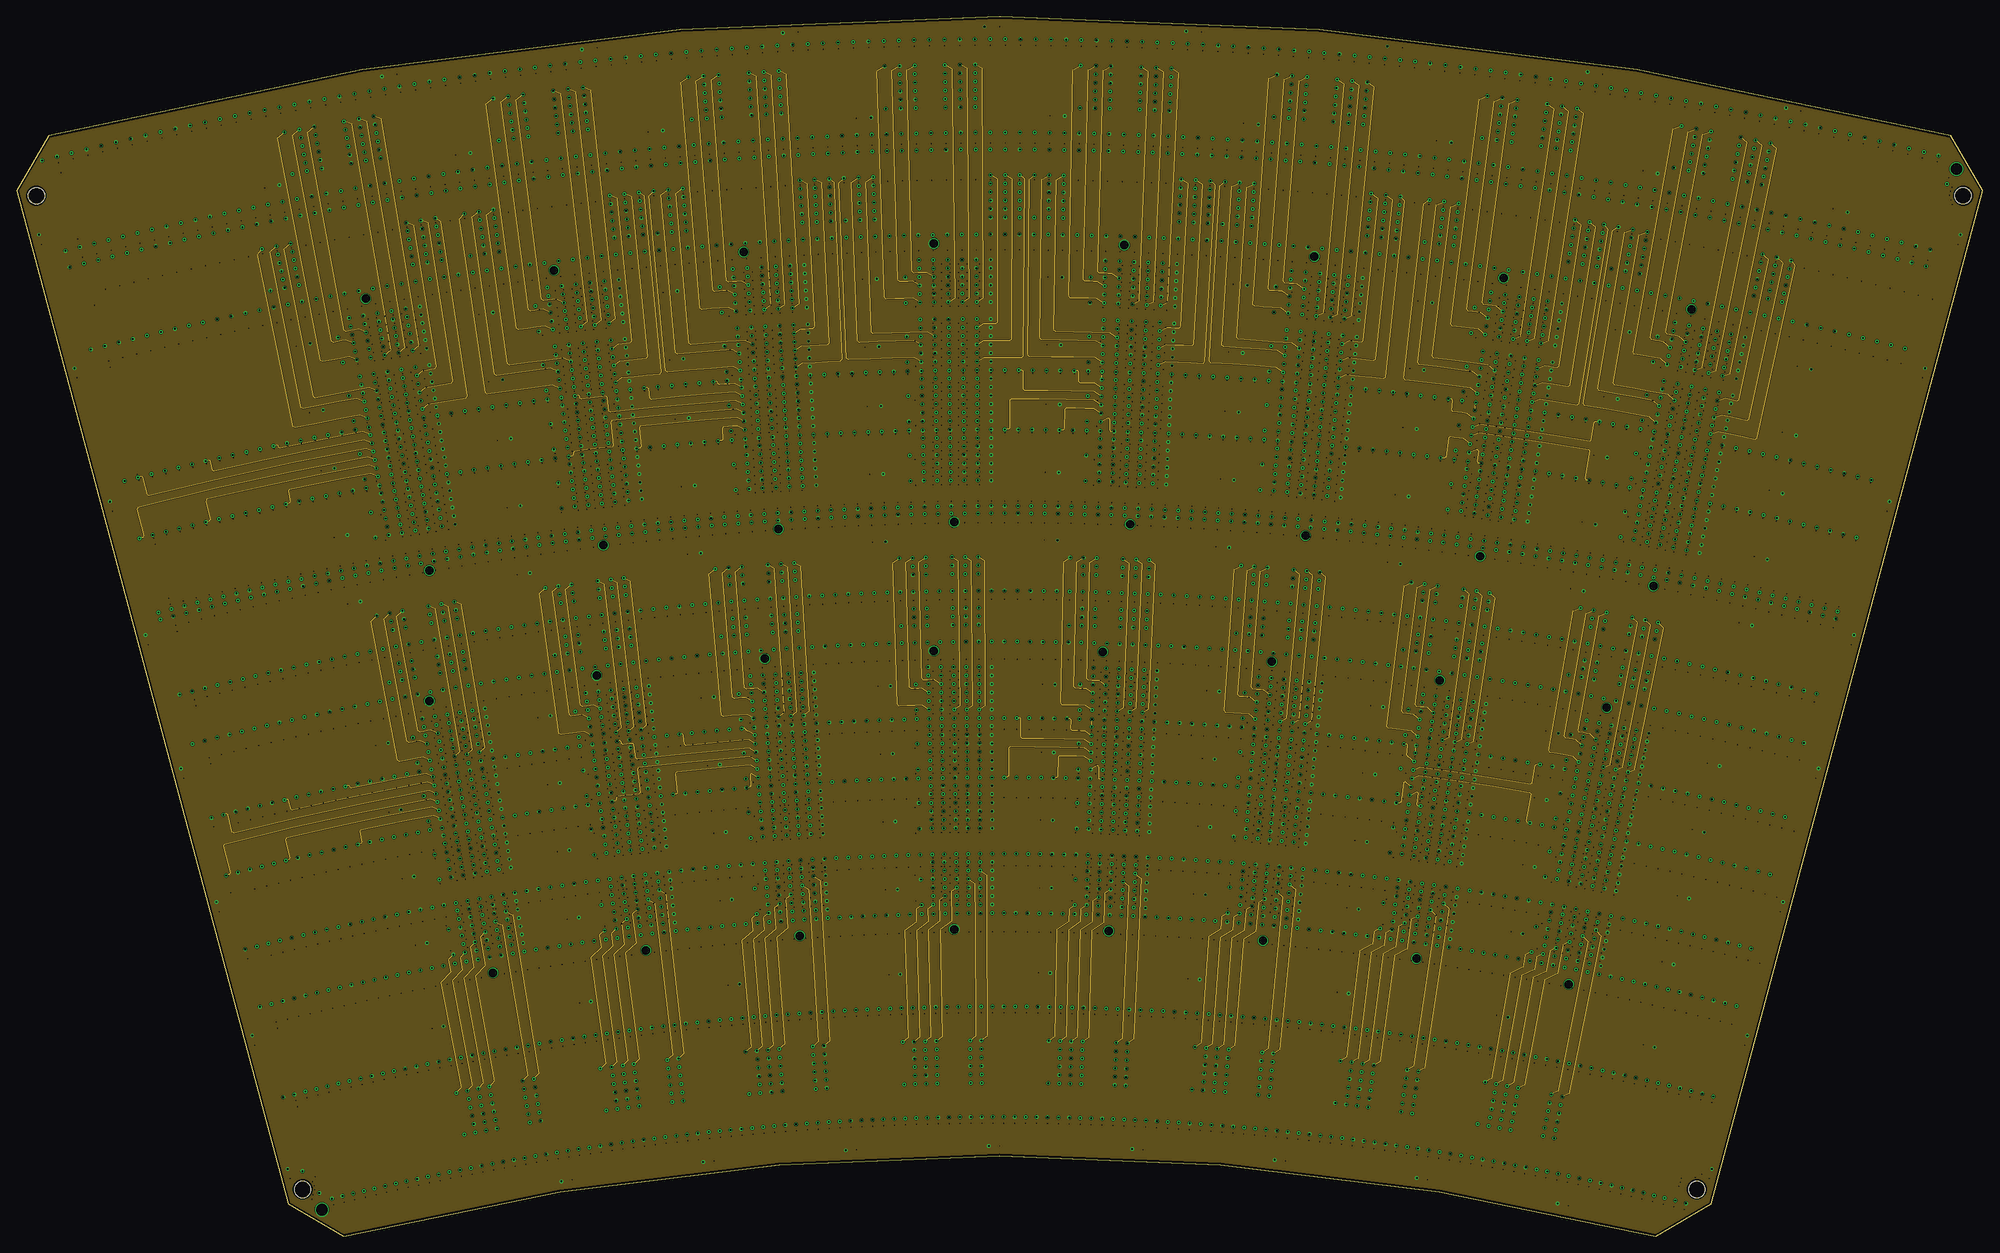
[diagram p13: board, inner layer Route14]
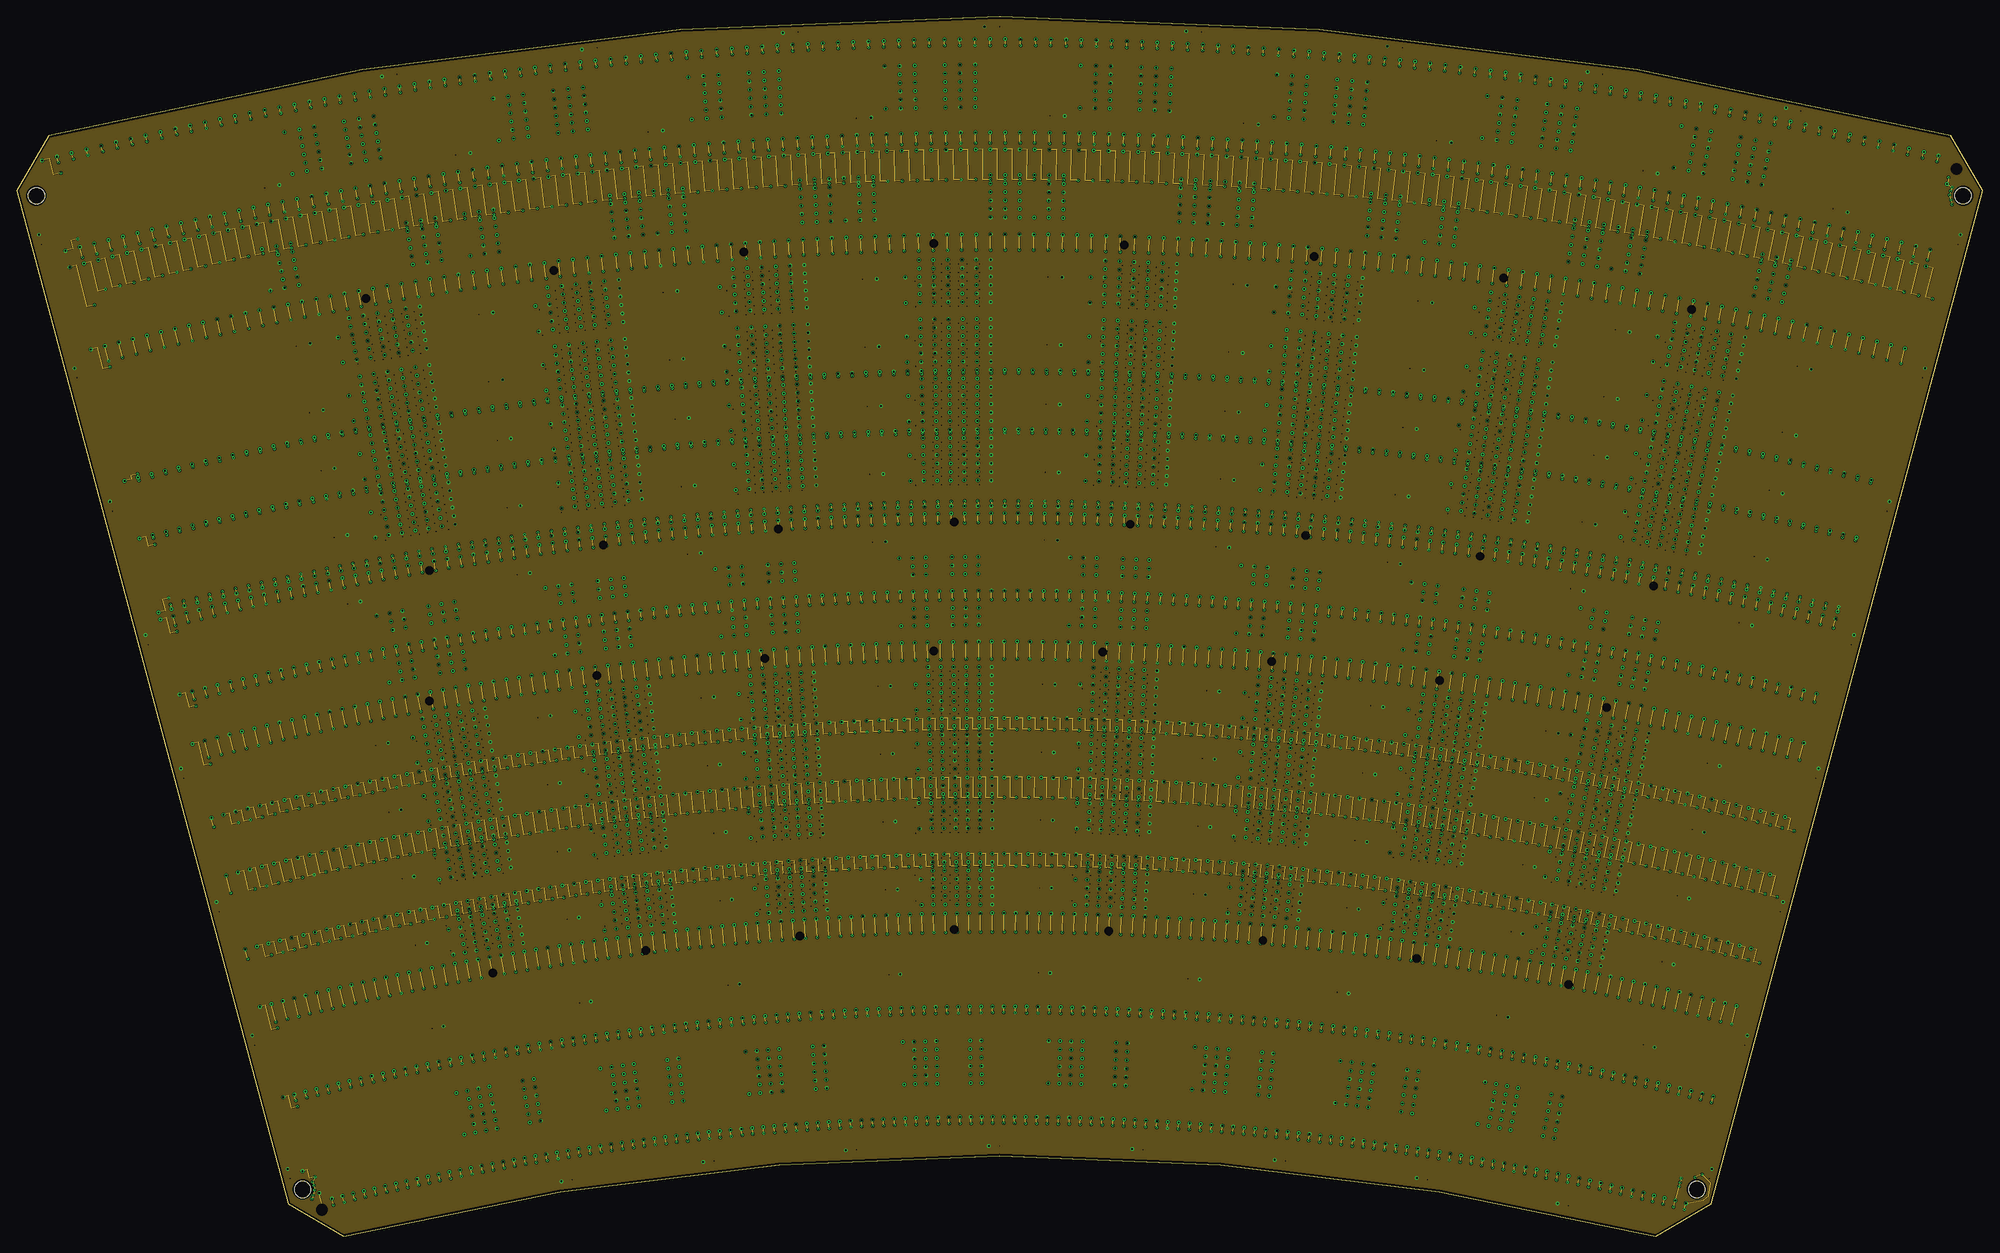
[diagram p14: board, inner layer Route15]
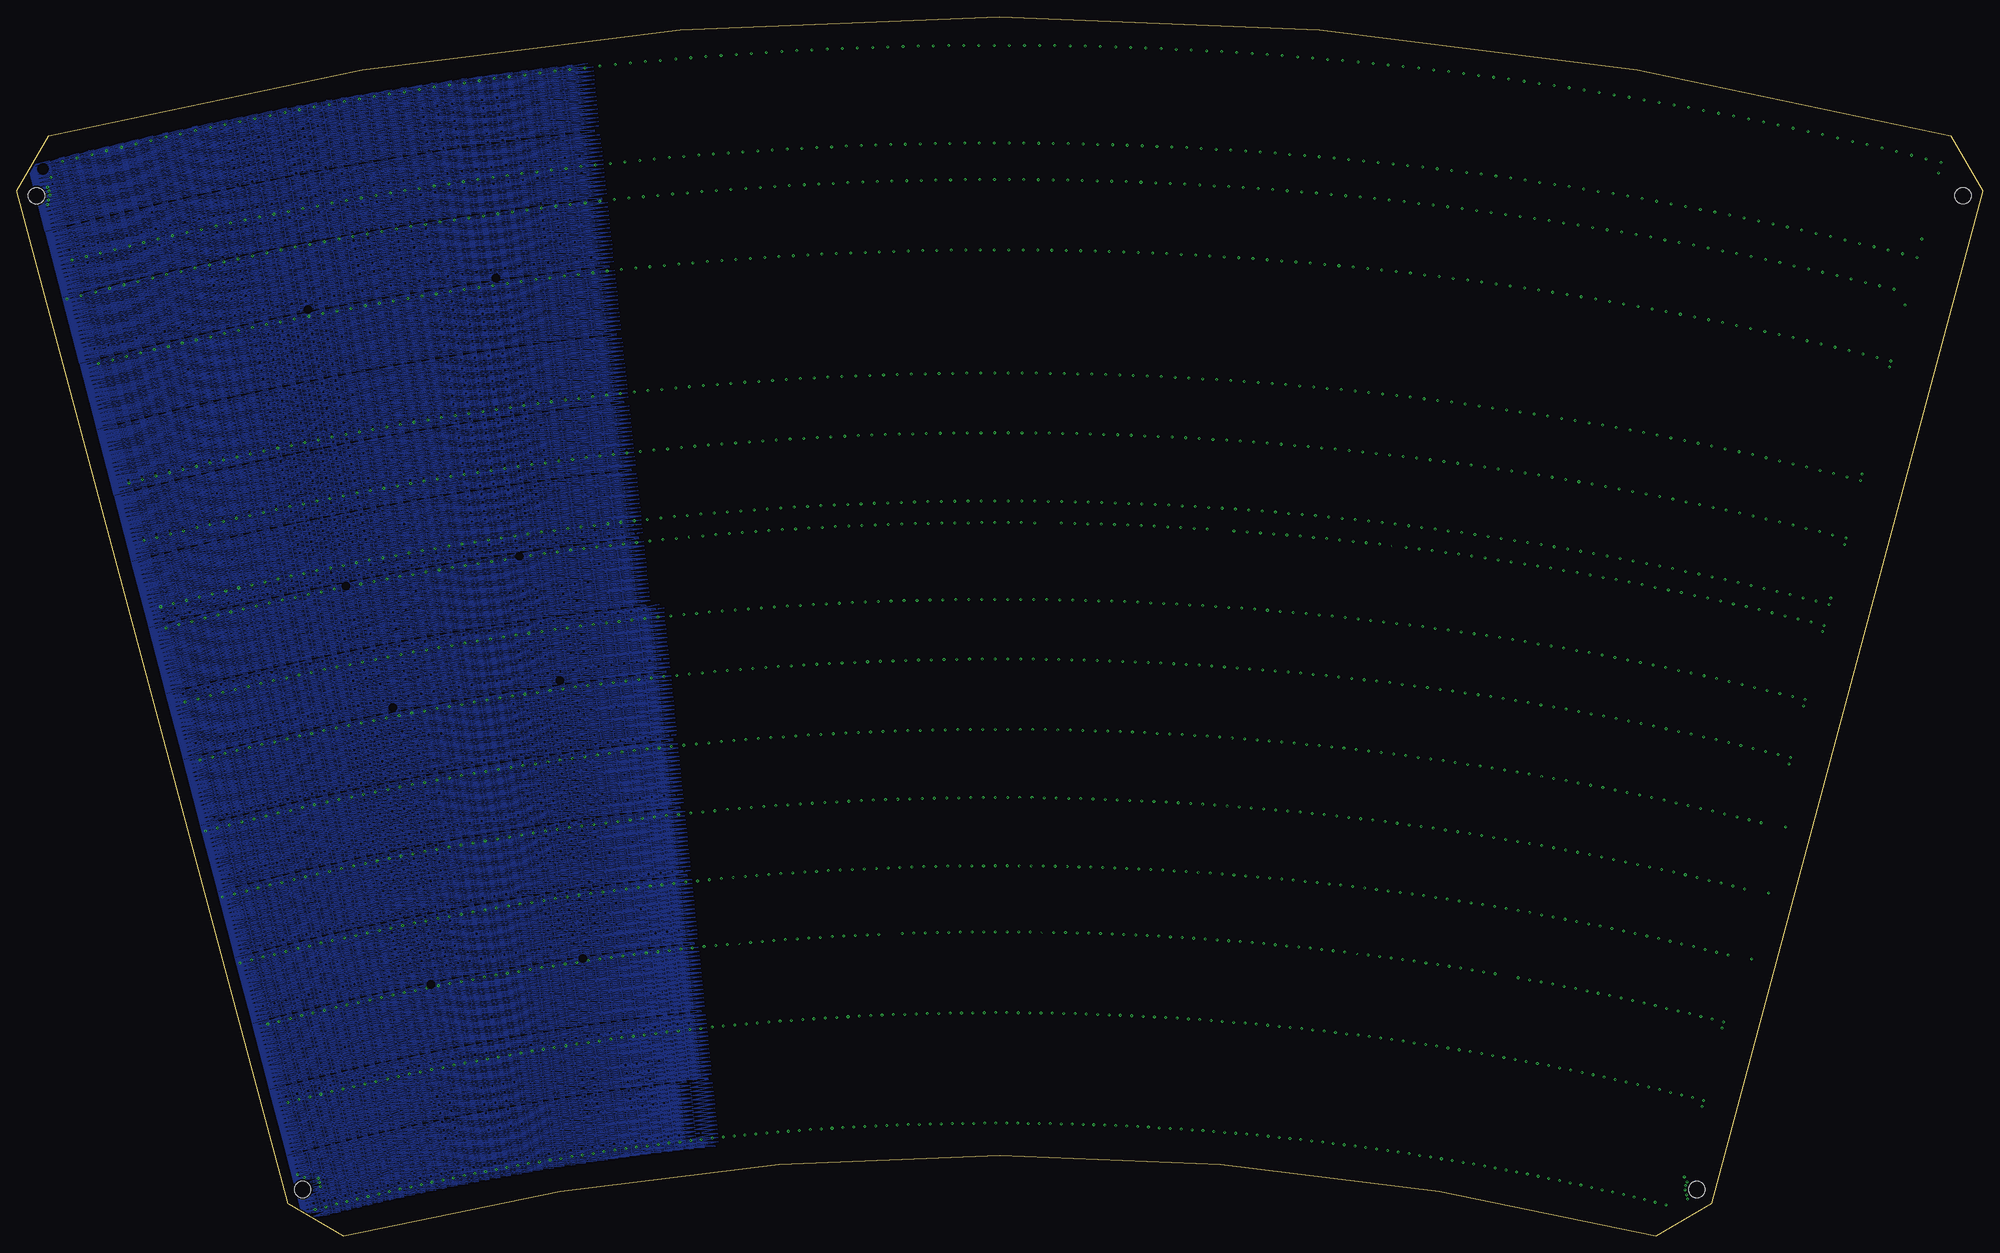
[diagram p15: board, bottom side, seen from below]

Size 294.34 x 182.51 mm. Coordinates in mm from the lower left corner, seen from the top.
Outline: 245.39,0 253.7,4.85 294.34,156.49 289.53,164.72 arc28 4.8,164.72 0,156.49 40.64,4.85 48.95,0 arc-28 245.39,0
Copper layers [2:1+(2+3+4+5+6+7+8+9+10+11+12+13+14+15)+16:15]: Top 0.035mm / dielectric 3mil / Route2 0.035mm / dielectric 7mil / Route3 0.035mm / dielectric 7mil / Route4 0.035mm / dielectric 7mil / Route5 0.035mm / dielectric 7mil / Route6 0.035mm / dielectric 7mil / Route7 0.035mm / dielectric 7mil / Route8 0.035mm / dielectric 7mil / Route9 0.035mm / dielectric 7mil / Route10 0.035mm / dielectric 7mil / Route11 0.035mm / dielectric 7mil / Route12 0.035mm / dielectric 7mil / Route13 0.035mm / dielectric 7mil / Route14 0.035mm / dielectric 7mil / Route15 0.035mm / dielectric 3mil / Bottom 0.035mm
Design rules "default *": minimum track width 4mil, minimum drill 8mil, track to track 0.06858125mm, track to pad 0.06858125mm, pad to pad 0.06858125mm, via to via 0.06858125mm, smd to smd 4mil, copper to edge 10mil, drill to drill 6mil, minimum pad ring 10mil, minimum via ring 5mil, stop-mask expansion 4mil, vias tented up to drill 5mil, thermal gap 10mil
Holes 2.46 mm at 42.81,7 2.95,155.7 251.53,7 291.39,155.7

## Footprints (pad centres in the part's own frame; a part is rotated, then mirrored left to right if it is on the bottom)
SEAM-30-02.0-L-06-1-A-K-TR = smd 0.635 x 0.635: P$1 -3.645,-18.415; P$2 -3.645,-17.145; P$3 -3.645,-15.875; P$4 -3.645,-14.605; P$5 -3.645,-13.335; P$6 -3.645,-12.065; P$7 -3.645,-10.795; P$8 -3.645,-9.525; P$9 -3.645,-8.255; P$10 -3.645,-6.985; P$11 -3.645,-5.715; P$12 -3.645,-4.445; P$13 -3.645,-3.175; P$14 -3.645,-1.905; P$15 -3.645,-0.635; P$16 -3.645,0.635; P$17 -3.645,1.905; P$18 -3.645,3.175; P$19 -3.645,4.445; P$20 -3.645,5.715; P$21 -3.645,6.985; P$22 -3.645,8.255; P$23 -3.645,9.525; P$24 -3.645,10.795; P$25 -3.645,12.065; P$26 -3.645,13.335; P$27 -3.645,14.605; P$28 -3.645,15.875; P$29 -3.645,17.145; P$30 -3.645,18.415; P$31 -4.915,-18.415; P$32 -4.915,-17.145; P$33 -4.915,-15.875; P$34 -4.915,-14.605; P$35 -4.915,-13.335; P$36 -4.915,-12.065; P$37 -4.915,-10.795; P$38 -4.915,-9.525; P$39 -4.915,-8.255; P$40 -4.915,-6.985; P$41 -4.915,-5.715; P$42 -4.915,-4.445; P$43 -4.915,-3.175; P$44 -4.915,-1.905; P$45 -4.915,-0.635; P$46 -4.915,0.635; P$47 -4.915,1.905; P$48 -4.915,3.175; P$49 -4.915,4.445; P$50 -4.915,5.715; P$51 -4.915,6.985; P$52 -4.915,8.255; P$53 -4.915,9.525; P$54 -4.915,10.795; P$55 -4.915,12.065; P$56 -4.915,13.335; P$57 -4.915,14.605; P$58 -4.915,15.875; P$59 -4.915,17.145; P$60 -4.915,18.415; P$61 -6.185,-18.415; P$62 -6.185,-17.145; P$63 -6.185,-15.875; P$64 -6.185,-14.605; P$65 -6.185,-13.335; P$66 -6.185,-12.065; P$67 -6.185,-10.795; P$68 -6.185,-9.525; P$69 -6.185,-8.255; P$70 -6.185,-6.985; P$71 -6.185,-5.715; P$72 -6.185,-4.445; P$73 -6.185,-3.175; P$74 -6.185,-1.905; P$75 -6.185,-0.635; P$76 -6.185,0.635; P$77 -6.185,1.905; P$78 -6.185,3.175; P$79 -6.185,4.445; P$80 -6.185,5.715; P$81 -6.185,6.985; P$82 -6.185,8.255; P$83 -6.185,9.525; P$84 -6.185,10.795; P$85 -6.185,12.065; P$86 -6.185,13.335; P$87 -6.185,14.605; P$88 -6.185,15.875; P$89 -6.185,17.145; P$90 -6.185,18.415; P$91 -7.455,-18.415; P$92 -7.455,-17.145; P$93 -7.455,-15.875; P$94 -7.455,-14.605; P$95 -7.455,-13.335; P$96 -7.455,-12.065; P$97 -7.455,-10.795; P$98 -7.455,-9.525; P$99 -7.455,-8.255; P$100 -7.455,-6.985; P$101 -7.455,-5.715; P$102 -7.455,-4.445; P$103 -7.455,-3.175; P$104 -7.455,-1.905; P$105 -7.455,-0.635; P$106 -7.455,0.635; P$107 -7.455,1.905; P$108 -7.455,3.175; P$109 -7.455,4.445; P$110 -7.455,5.715; P$111 -7.455,6.985; P$112 -7.455,8.255; P$113 -7.455,9.525; P$114 -7.455,10.795; P$115 -7.455,12.065; P$116 -7.455,13.335; P$117 -7.455,14.605; P$118 -7.455,15.875; P$119 -7.455,17.145; P$120 -7.455,18.415; P$121 -8.725,-18.415; P$122 -8.725,-17.145; P$123 -8.725,-15.875; P$124 -8.725,-14.605; P$125 -8.725,-13.335; P$126 -8.725,-12.065; P$127 -8.725,-10.795; P$128 -8.725,-9.525; P$129 -8.725,-8.255; P$130 -8.725,-6.985; P$131 -8.725,-5.715; P$132 -8.725,-4.445; P$133 -8.725,-3.175; P$134 -8.725,-1.905; P$135 -8.725,-0.635; P$136 -8.725,0.635; P$137 -8.725,1.905; P$138 -8.725,3.175; P$139 -8.725,4.445; P$140 -8.725,5.715; P$141 -8.725,6.985; P$142 -8.725,8.255; P$143 -8.725,9.525; P$144 -8.725,10.795; P$145 -8.725,12.065; P$146 -8.725,13.335; P$147 -8.725,14.605; P$148 -8.725,15.875; P$149 -8.725,17.145; P$150 -8.725,18.415; P$151 -9.995,-18.415; P$152 -9.995,-17.145; P$153 -9.995,-15.875; P$154 -9.995,-14.605; P$155 -9.995,-13.335; P$156 -9.995,-12.065; P$157 -9.995,-10.795; P$158 -9.995,-9.525; P$159 -9.995,-8.255; P$160 -9.995,-6.985; P$161 -9.995,-5.715; P$162 -9.995,-4.445; P$163 -9.995,-3.175; P$164 -9.995,-1.905; P$165 -9.995,-0.635; P$166 -9.995,0.635; P$167 -9.995,1.905; P$168 -9.995,3.175; P$169 -9.995,4.445; P$170 -9.995,5.715; P$171 -9.995,6.985; P$172 -9.995,8.255; P$173 -9.995,9.525; P$174 -9.995,10.795; P$175 -9.995,12.065; P$176 -9.995,13.335; P$177 -9.995,14.605; P$178 -9.995,15.875; P$179 -9.995,17.145; P$180 -9.995,18.415
SD2431 = smd 1.321 x 0.533: P$1 -1.524,1.27; P$2 -1.524,0; P$3 -1.524,-1.27; P$4 1.524,-1.27; P$5 1.524,0; P$6 1.524,1.27

## Placement (x,y rotation side)
U$1  SEAM-30-02.0-L-06-1-A-K-TR  [SEAM-30-02.0-L-06-1-A-K-TR]  256.03,116.28 348 top
U$2  SEAM-30-02.0-L-06-1-A-K-TR  [SEAM-30-02.0-L-06-1-A-K-TR]  243.36,56.65 348 top
U$3  SEAM-30-02.0-L-06-1-A-K-TR  [SEAM-30-02.0-L-06-1-A-K-TR]  229.08,121.28 351 top
U$4  SEAM-30-02.0-L-06-1-A-K-TR  [SEAM-30-02.0-L-06-1-A-K-TR]  219.54,61.07 351 top
U$5  SEAM-30-02.0-L-06-1-A-K-TR  [SEAM-30-02.0-L-06-1-A-K-TR]  201.9,124.86 354 top
U$6  SEAM-30-02.0-L-06-1-A-K-TR  [SEAM-30-02.0-L-06-1-A-K-TR]  195.53,64.23 354 top
U$7  SEAM-30-02.0-L-06-1-A-K-TR  [SEAM-30-02.0-L-06-1-A-K-TR]  174.57,127.01 357 top
U$8  SEAM-30-02.0-L-06-1-A-K-TR  [SEAM-30-02.0-L-06-1-A-K-TR]  171.38,66.13 357 top
U$9  SEAM-30-02.0-L-06-1-A-K-TR  [SEAM-30-02.0-L-06-1-A-K-TR]  147.17,127.72 0 top
U$10  SEAM-30-02.0-L-06-1-A-K-TR  [SEAM-30-02.0-L-06-1-A-K-TR]  147.17,66.76 0 top
U$11  SEAM-30-02.0-L-06-1-A-K-TR  [SEAM-30-02.0-L-06-1-A-K-TR]  119.76,127.01 3 top
U$12  SEAM-30-02.0-L-06-1-A-K-TR  [SEAM-30-02.0-L-06-1-A-K-TR]  122.95,66.13 3 top
U$13  SEAM-30-02.0-L-06-1-A-K-TR  [SEAM-30-02.0-L-06-1-A-K-TR]  92.44,124.86 6 top
U$14  SEAM-30-02.0-L-06-1-A-K-TR  [SEAM-30-02.0-L-06-1-A-K-TR]  98.81,64.23 6 top
U$15  SEAM-30-02.0-L-06-1-A-K-TR  [SEAM-30-02.0-L-06-1-A-K-TR]  65.26,121.28 9 top
U$16  SEAM-30-02.0-L-06-1-A-K-TR  [SEAM-30-02.0-L-06-1-A-K-TR]  74.79,61.07 9 top
U$17  DS2431  [SD2431]  252.45,143.74 78 top
U$18  DS2431  [SD2431]  224.13,148.69 81 top
U$19  DS2431  [SD2431]  195.55,151.87 84 top
U$20  DS2431  [SD2431]  166.73,153.64 87 top
U$21  DS2431  [SD2431]  137.9,153.9 90 top
U$22  DS2431  [SD2431]  109.19,152.63 93 top
U$23  DS2431  [SD2431]  80.62,150.09 96 top
U$24  DS2431  [SD2431]  52.3,145.77 99 top

## Library data of the parts
U$1-U$16 = SEAM-30-02.0-L-06-1-A-K-TR-offset-origin
U$17-U$24 = DS2431-Hemmick

## Nets
GND: U$1.P$1 U$1.P$2 U$1.P$3 U$1.P$4 U$1.P$5 U$1.P$6 U$1.P$7 U$1.P$8 U$1.P$9 U$1.P$10 U$1.P$11 U$1.P$12 U$1.P$13 U$1.P$14 U$1.P$15 U$1.P$16 U$1.P$17 U$1.P$18 U$1.P$19 U$1.P$20 U$1.P$21 U$1.P$22 U$1.P$23 U$1.P$24 U$1.P$25 U$1.P$26 U$1.P$27 U$1.P$28 U$1.P$29 U$1.P$31 U$1.P$32 U$1.P$39 U$1.P$46 U$1.P$53 U$1.P$60 U$1.P$61 U$1.P$62 U$1.P$69 U$1.P$76 U$1.P$83 U$1.P$90 U$1.P$91 U$1.P$92 U$1.P$99 U$1.P$106 U$1.P$113 U$1.P$120 U$1.P$121 U$1.P$150 U$1.P$151 U$1.P$180 U$2.P$1 U$2.P$2 U$2.P$3 U$2.P$4 U$2.P$5 U$2.P$6 U$2.P$7 U$2.P$8 U$2.P$9 U$2.P$10 U$2.P$11 U$2.P$12 U$2.P$13 U$2.P$14 U$2.P$15 U$2.P$16 U$2.P$17 U$2.P$18 U$2.P$19 U$2.P$20 U$2.P$21 U$2.P$22 U$2.P$23 U$2.P$24 U$2.P$25 U$2.P$26 U$2.P$27 U$2.P$28 U$2.P$29 U$2.P$31 U$2.P$32 U$2.P$39 U$2.P$46 U$2.P$53 U$2.P$60 U$2.P$61 U$2.P$62 U$2.P$69 U$2.P$76 U$2.P$83 U$2.P$90 U$2.P$91 U$2.P$92 U$2.P$99 U$2.P$106 U$2.P$113 U$2.P$120 U$2.P$121 U$2.P$150 U$2.P$151 U$2.P$180 U$3.P$1 U$3.P$2 U$3.P$3 U$3.P$4 U$3.P$5 U$3.P$6 U$3.P$7 U$3.P$8 U$3.P$9 U$3.P$10 U$3.P$11 U$3.P$12 U$3.P$13 U$3.P$14 U$3.P$15 U$3.P$16 U$3.P$17 U$3.P$18 U$3.P$19 U$3.P$20 U$3.P$21 U$3.P$22 U$3.P$23 U$3.P$24 U$3.P$25 U$3.P$26 U$3.P$27 U$3.P$28 U$3.P$29 U$3.P$31 U$3.P$32 U$3.P$39 U$3.P$46 U$3.P$53 U$3.P$60 U$3.P$61 U$3.P$62 U$3.P$69 U$3.P$76 U$3.P$83 U$3.P$90 U$3.P$91 U$3.P$92 U$3.P$99 U$3.P$106 U$3.P$113 U$3.P$120 U$3.P$121 U$3.P$150 U$3.P$151 U$3.P$180 U$4.P$1 U$4.P$2 U$4.P$3 U$4.P$4 U$4.P$5 U$4.P$6 U$4.P$7 U$4.P$8 U$4.P$9 U$4.P$10 U$4.P$11 U$4.P$12 U$4.P$13 U$4.P$14 U$4.P$15 U$4.P$16 U$4.P$17 U$4.P$18 U$4.P$19 U$4.P$20 U$4.P$21 U$4.P$22 U$4.P$23 U$4.P$24 U$4.P$25 U$4.P$26 U$4.P$27 U$4.P$28 U$4.P$29 U$4.P$31 U$4.P$32 U$4.P$39 U$4.P$46 U$4.P$53 U$4.P$60 U$4.P$61 U$4.P$62 U$4.P$69 U$4.P$76 U$4.P$83 U$4.P$90 U$4.P$91 U$4.P$92 U$4.P$99 U$4.P$106 U$4.P$113 U$4.P$120 U$4.P$121 U$4.P$150 U$4.P$151 U$4.P$180 U$5.P$1 U$5.P$2 U$5.P$3 U$5.P$4 U$5.P$5 U$5.P$6 U$5.P$7 U$5.P$8 U$5.P$9 U$5.P$10 U$5.P$11 U$5.P$12 U$5.P$13 U$5.P$14 U$5.P$15 U$5.P$16 U$5.P$17 U$5.P$18 U$5.P$19 U$5.P$20 U$5.P$21 U$5.P$22 U$5.P$23 U$5.P$24 U$5.P$25 U$5.P$26 U$5.P$27 U$5.P$28 U$5.P$29 U$5.P$31 U$5.P$32 U$5.P$39 U$5.P$46 U$5.P$53 U$5.P$60 U$5.P$61 U$5.P$62 U$5.P$69 U$5.P$76 U$5.P$83 U$5.P$90 U$5.P$91 U$5.P$92 U$5.P$99 U$5.P$106 U$5.P$113 U$5.P$120 U$5.P$121 U$5.P$150 U$5.P$151 U$5.P$180 U$6.P$1 U$6.P$2 U$6.P$3 U$6.P$4 U$6.P$5 U$6.P$6 U$6.P$7 U$6.P$8 U$6.P$9 U$6.P$10 U$6.P$11 U$6.P$12 U$6.P$13 U$6.P$14 U$6.P$15 U$6.P$16 U$6.P$17 U$6.P$18 U$6.P$19 U$6.P$20 U$6.P$21 U$6.P$22 U$6.P$23 U$6.P$24 U$6.P$25 U$6.P$26 U$6.P$27 U$6.P$28 U$6.P$29 U$6.P$31 U$6.P$32 U$6.P$39 U$6.P$46 U$6.P$53 U$6.P$60 U$6.P$61 U$6.P$62 U$6.P$69 U$6.P$76 U$6.P$83 U$6.P$90 U$6.P$91 U$6.P$92 U$6.P$99 U$6.P$106 U$6.P$113 U$6.P$120 U$6.P$121 U$6.P$150 U$6.P$151 U$6.P$180 U$7.P$1 U$7.P$2 U$7.P$3 U$7.P$4 U$7.P$5 U$7.P$6 U$7.P$7 U$7.P$8 U$7.P$9 U$7.P$10 U$7.P$11 U$7.P$12 U$7.P$13 U$7.P$14 U$7.P$15 U$7.P$16 U$7.P$17 U$7.P$18 U$7.P$19 U$7.P$20 U$7.P$21 U$7.P$22 U$7.P$23 U$7.P$24 U$7.P$25 U$7.P$26 U$7.P$27 U$7.P$28 U$7.P$29 U$7.P$31 U$7.P$32 U$7.P$39 U$7.P$46 U$7.P$53 U$7.P$60 U$7.P$61 U$7.P$62 U$7.P$69 U$7.P$76 U$7.P$83 U$7.P$90 U$7.P$91 U$7.P$92 U$7.P$99 U$7.P$106 U$7.P$113 U$7.P$120 U$7.P$121 U$7.P$150 U$7.P$151 U$7.P$180 U$8.P$1 U$8.P$2 U$8.P$3 U$8.P$4 U$8.P$5 U$8.P$6 U$8.P$7 U$8.P$8 U$8.P$9 U$8.P$10 U$8.P$11 U$8.P$12 U$8.P$13 U$8.P$14 U$8.P$15 U$8.P$16 U$8.P$17 U$8.P$18 U$8.P$19 U$8.P$20 U$8.P$21 U$8.P$22 U$8.P$23 U$8.P$24 U$8.P$25 U$8.P$26 U$8.P$27 U$8.P$28 U$8.P$29 U$8.P$31 U$8.P$32 U$8.P$39 U$8.P$46 U$8.P$53 U$8.P$60 U$8.P$61 U$8.P$62 U$8.P$69 U$8.P$76 U$8.P$83 U$8.P$90 U$8.P$91 U$8.P$92 U$8.P$99 U$8.P$106 U$8.P$113 U$8.P$120 U$8.P$121 U$8.P$150 U$8.P$151 U$8.P$180 U$9.P$1 U$9.P$2 U$9.P$3 U$9.P$4 U$9.P$5 U$9.P$6 U$9.P$7 U$9.P$8 U$9.P$9 U$9.P$10 U$9.P$11 U$9.P$12 U$9.P$13 U$9.P$14 U$9.P$15 U$9.P$16 U$9.P$17 U$9.P$18 U$9.P$19 U$9.P$20 U$9.P$21 U$9.P$22 U$9.P$23 U$9.P$24 U$9.P$25 U$9.P$26 U$9.P$27 U$9.P$28 U$9.P$29 U$9.P$31 U$9.P$32 U$9.P$39 U$9.P$46 U$9.P$53 U$9.P$60 U$9.P$61 U$9.P$62 U$9.P$69 U$9.P$76 U$9.P$83 U$9.P$90 U$9.P$91 U$9.P$92 U$9.P$99 U$9.P$106 U$9.P$113 U$9.P$120 U$9.P$121 U$9.P$150 U$9.P$151 U$9.P$180 U$10.P$1 U$10.P$2 U$10.P$3 U$10.P$4 U$10.P$5 U$10.P$6 U$10.P$7 U$10.P$8 U$10.P$9 U$10.P$10 U$10.P$11 U$10.P$12 U$10.P$13 U$10.P$14 U$10.P$15 U$10.P$16 U$10.P$17 U$10.P$18 U$10.P$19 U$10.P$20 U$10.P$21 U$10.P$22 U$10.P$23 U$10.P$24 U$10.P$25 U$10.P$26 U$10.P$27 U$10.P$28 U$10.P$29 U$10.P$31 U$10.P$32 U$10.P$39 U$10.P$46 U$10.P$53 U$10.P$60 U$10.P$61 U$10.P$62 U$10.P$69 U$10.P$76 U$10.P$83 U$10.P$90 U$10.P$91 U$10.P$92 U$10.P$99 U$10.P$106 U$10.P$113 U$10.P$120 U$10.P$121 U$10.P$150 U$10.P$151 U$10.P$180 U$11.P$1 U$11.P$2 U$11.P$3 U$11.P$4 U$11.P$5 U$11.P$6 U$11.P$7 U$11.P$8 U$11.P$9 U$11.P$10 U$11.P$11 U$11.P$12 U$11.P$13 U$11.P$14 U$11.P$15 U$11.P$16 U$11.P$17 U$11.P$18 U$11.P$19 U$11.P$20 U$11.P$21 U$11.P$22 U$11.P$23 U$11.P$24 U$11.P$25 U$11.P$26 U$11.P$27 U$11.P$28 U$11.P$29 U$11.P$31 U$11.P$32 U$11.P$39 U$11.P$46 U$11.P$53 U$11.P$60 U$11.P$61 U$11.P$62 U$11.P$69 U$11.P$76 U$11.P$83 U$11.P$90 U$11.P$91 U$11.P$92 U$11.P$99 U$11.P$106 U$11.P$113 U$11.P$120 U$11.P$121 U$11.P$150 U$11.P$151 U$11.P$180 U$12.P$1 U$12.P$2 U$12.P$3 U$12.P$4 U$12.P$5 U$12.P$6 U$12.P$7 U$12.P$8 U$12.P$9 U$12.P$10 U$12.P$11 U$12.P$12 U$12.P$13 U$12.P$14 U$12.P$15 U$12.P$16 U$12.P$17 U$12.P$18 U$12.P$19 U$12.P$20 U$12.P$21 U$12.P$22 U$12.P$23 U$12.P$24 U$12.P$25 U$12.P$26 U$12.P$27 U$12.P$28 U$12.P$29 U$12.P$31 U$12.P$32 U$12.P$39 U$12.P$46 U$12.P$53 U$12.P$60 U$12.P$61 U$12.P$62 U$12.P$69 U$12.P$76 U$12.P$83 U$12.P$90 U$12.P$91 U$12.P$92 U$12.P$99 U$12.P$106 U$12.P$113 U$12.P$120 U$12.P$121 U$12.P$150 U$12.P$151 U$12.P$180 U$13.P$1 U$13.P$2 U$13.P$3 U$13.P$4 U$13.P$5 U$13.P$6 U$13.P$7 U$13.P$8 U$13.P$9 U$13.P$10 U$13.P$11 U$13.P$12 U$13.P$13 U$13.P$14 U$13.P$15 U$13.P$16 U$13.P$17 U$13.P$18 U$13.P$19 U$13.P$20 U$13.P$21 U$13.P$22 U$13.P$23 U$13.P$24 U$13.P$25 U$13.P$26 U$13.P$27 U$13.P$28 U$13.P$29 U$13.P$31 U$13.P$32 U$13.P$39 U$13.P$46 U$13.P$53 U$13.P$60 U$13.P$61 U$13.P$62 U$13.P$69 U$13.P$76 U$13.P$83 U$13.P$90 U$13.P$91 U$13.P$92 U$13.P$99 U$13.P$106 U$13.P$113 U$13.P$120 U$13.P$121 U$13.P$150 U$13.P$151 U$13.P$180 U$14.P$1 U$14.P$2 U$14.P$3 U$14.P$4 U$14.P$5 U$14.P$6 U$14.P$7 U$14.P$8 U$14.P$9 U$14.P$10 U$14.P$11 U$14.P$12 U$14.P$13 U$14.P$14 U$14.P$15 U$14.P$16 U$14.P$17 U$14.P$18 U$14.P$19 U$14.P$20 U$14.P$21 U$14.P$22 U$14.P$23 U$14.P$24 U$14.P$25 U$14.P$26 U$14.P$27 U$14.P$28 U$14.P$29 U$14.P$31 U$14.P$32 U$14.P$39 U$14.P$46 U$14.P$53 U$14.P$60 U$14.P$61 U$14.P$62 U$14.P$69 U$14.P$76 U$14.P$83 U$14.P$90 U$14.P$91 U$14.P$92 U$14.P$99 U$14.P$106 U$14.P$113 U$14.P$120 U$14.P$121 U$14.P$150 U$14.P$151 U$14.P$180 U$15.P$1 U$15.P$2 U$15.P$3 U$15.P$4 U$15.P$5 U$15.P$6 U$15.P$7 U$15.P$8 U$15.P$9 U$15.P$10 U$15.P$11 U$15.P$12 U$15.P$13 U$15.P$14 U$15.P$15 U$15.P$16 U$15.P$17 U$15.P$18 U$15.P$19 U$15.P$20 U$15.P$21 U$15.P$22 U$15.P$23 U$15.P$24 U$15.P$25 U$15.P$26 U$15.P$27 U$15.P$28 U$15.P$29 U$15.P$31 U$15.P$32 U$15.P$39 U$15.P$46 U$15.P$53 U$15.P$60 U$15.P$61 U$15.P$62 U$15.P$69 U$15.P$76 U$15.P$83 U$15.P$90 U$15.P$91 U$15.P$92 U$15.P$99 U$15.P$106 U$15.P$113 U$15.P$120 U$15.P$121 U$15.P$150 U$15.P$151 U$15.P$180 U$16.P$1 U$16.P$2 U$16.P$3 U$16.P$4 U$16.P$5 U$16.P$6 U$16.P$7 U$16.P$8 U$16.P$9 U$16.P$10 U$16.P$11 U$16.P$12 U$16.P$13 U$16.P$14 U$16.P$15 U$16.P$16 U$16.P$17 U$16.P$18 U$16.P$19 U$16.P$20 U$16.P$21 U$16.P$22 U$16.P$23 U$16.P$24 U$16.P$25 U$16.P$26 U$16.P$27 U$16.P$28 U$16.P$29 U$16.P$31 U$16.P$32 U$16.P$39 U$16.P$46 U$16.P$53 U$16.P$60 U$16.P$61 U$16.P$62 U$16.P$69 U$16.P$76 U$16.P$83 U$16.P$90 U$16.P$91 U$16.P$92 U$16.P$99 U$16.P$106 U$16.P$113 U$16.P$120 U$16.P$121 U$16.P$150 U$16.P$151 U$16.P$180 U$17.P$1 U$18.P$1 U$19.P$1 U$20.P$1 U$21.P$1 U$22.P$1 U$23.P$1 U$24.P$1
N$1: U$1.P$30 U$17.P$2
N$2: U$3.P$30 U$18.P$2
N$3: U$5.P$30 U$19.P$2
N$4: U$7.P$30 U$20.P$2
N$5: U$9.P$30 U$21.P$2
N$6: U$13.P$30 U$23.P$2
N$7: U$15.P$30 U$24.P$2
N$8: U$11.P$30 U$22.P$2
ZZ.00.000: U$2.P$34
ZZ.00.001: U$2.P$63
ZZ.00.002: U$2.P$98
ZZ.00.003: U$2.P$127
ZZ.00.004: U$2.P$156
ZZ.00.005: U$2.P$35
ZZ.00.006: U$2.P$64
ZZ.00.007: U$2.P$93
ZZ.00.008: U$2.P$128
ZZ.00.009: U$2.P$157
ZZ.00.010: U$2.P$36
ZZ.00.011: U$2.P$65
ZZ.00.012: U$2.P$94
ZZ.00.013: U$2.P$123
ZZ.00.014: U$2.P$158
ZZ.00.015: U$2.P$152
ZZ.00.016: U$4.P$34
ZZ.00.017: U$4.P$63
ZZ.00.018: U$4.P$98
ZZ.00.019: U$4.P$127
ZZ.00.020: U$4.P$156
ZZ.00.021: U$4.P$35
ZZ.00.022: U$4.P$64
ZZ.00.023: U$4.P$93
ZZ.00.024: U$4.P$128
ZZ.00.025: U$4.P$36
ZZ.00.026: U$4.P$65
ZZ.00.027: U$4.P$94
ZZ.00.028: U$4.P$123
ZZ.00.029: U$4.P$158
ZZ.00.030: U$4.P$152
ZZ.00.031: U$4.P$157
ZZ.00.032: U$6.P$34
ZZ.00.033: U$6.P$63
ZZ.00.034: U$6.P$98
ZZ.00.035: U$6.P$127
ZZ.00.036: U$6.P$35
ZZ.00.037: U$6.P$64
ZZ.00.038: U$6.P$36
ZZ.00.039: U$6.P$65
ZZ.00.040: U$6.P$94
ZZ.00.041: U$6.P$123
ZZ.00.042: U$6.P$158
ZZ.00.043: U$6.P$152
ZZ.00.044: U$6.P$93
ZZ.00.045: U$6.P$128
ZZ.00.046: U$6.P$157
ZZ.00.047: U$6.P$156
ZZ.00.048: U$8.P$34
ZZ.00.049: U$8.P$35
ZZ.00.050: U$8.P$64
ZZ.00.051: U$8.P$36
ZZ.00.052: U$8.P$65
ZZ.00.053: U$8.P$94
ZZ.00.054: U$8.P$123
ZZ.00.055: U$8.P$158
ZZ.00.056: U$8.P$152
ZZ.00.057: U$8.P$93
ZZ.00.058: U$8.P$128
ZZ.00.059: U$8.P$157
ZZ.00.060: U$8.P$63
ZZ.00.061: U$8.P$98
ZZ.00.062: U$8.P$127
ZZ.00.063: U$8.P$156
ZZ.00.064: U$10.P$36
ZZ.00.065: U$10.P$65
ZZ.00.066: U$10.P$94
ZZ.00.067: U$10.P$123
ZZ.00.068: U$10.P$158
ZZ.00.069: U$10.P$152
ZZ.00.070: U$10.P$35
ZZ.00.071: U$10.P$64
ZZ.00.072: U$10.P$93
ZZ.00.073: U$10.P$128
ZZ.00.074: U$10.P$157
ZZ.00.075: U$10.P$34
ZZ.00.076: U$10.P$63
ZZ.00.077: U$10.P$98
ZZ.00.078: U$10.P$127
ZZ.00.079: U$10.P$156
ZZ.00.080: U$12.P$36
ZZ.00.081: U$12.P$65
ZZ.00.082: U$12.P$94
ZZ.00.083: U$12.P$123
ZZ.00.084: U$12.P$158
ZZ.00.085: U$12.P$152
ZZ.00.086: U$12.P$35
ZZ.00.087: U$12.P$64
ZZ.00.088: U$12.P$93
ZZ.00.089: U$12.P$128
ZZ.00.090: U$12.P$157
ZZ.00.091: U$12.P$34
ZZ.00.092: U$12.P$63
ZZ.00.093: U$12.P$98
ZZ.00.094: U$12.P$127
ZZ.00.095: U$12.P$156
ZZ.00.096: U$14.P$36
ZZ.00.097: U$14.P$65
ZZ.00.098: U$14.P$94
ZZ.00.099: U$14.P$123
ZZ.00.100: U$14.P$158
ZZ.00.101: U$14.P$152
ZZ.00.102: U$14.P$35
ZZ.00.103: U$14.P$64
ZZ.00.104: U$14.P$93
ZZ.00.105: U$14.P$128
ZZ.00.106: U$14.P$157
ZZ.00.107: U$14.P$34
ZZ.00.108: U$14.P$63
ZZ.00.109: U$14.P$98
ZZ.00.110: U$14.P$127
ZZ.00.111: U$14.P$156
ZZ.00.112: U$16.P$36
ZZ.00.113: U$16.P$65
ZZ.00.114: U$16.P$94
ZZ.00.115: U$16.P$123
ZZ.00.116: U$16.P$158
ZZ.00.117: U$16.P$152
ZZ.00.118: U$16.P$35
ZZ.00.119: U$16.P$64
ZZ.00.120: U$16.P$93
ZZ.00.121: U$16.P$128
ZZ.00.122: U$16.P$157
ZZ.00.123: U$16.P$34
ZZ.00.124: U$16.P$63
ZZ.00.125: U$16.P$98
ZZ.00.126: U$16.P$127
ZZ.00.127: U$16.P$156
ZZ.01.000: U$2.P$33
ZZ.01.001: U$2.P$68
ZZ.01.002: U$2.P$97
ZZ.01.003: U$2.P$126
ZZ.01.004: U$2.P$155
ZZ.01.005: U$2.P$38
ZZ.01.006: U$2.P$67
ZZ.01.007: U$2.P$96
ZZ.01.008: U$2.P$125
ZZ.01.009: U$2.P$154
ZZ.01.010: U$2.P$37
ZZ.01.011: U$2.P$66
ZZ.01.012: U$2.P$95
ZZ.01.013: U$2.P$124
ZZ.01.014: U$2.P$153
ZZ.01.015: U$2.P$122
ZZ.01.016: U$4.P$33
ZZ.01.017: U$4.P$68
ZZ.01.018: U$4.P$97
ZZ.01.019: U$4.P$126
ZZ.01.020: U$4.P$155
ZZ.01.021: U$4.P$38
ZZ.01.022: U$4.P$67
ZZ.01.023: U$4.P$96
ZZ.01.024: U$4.P$125
ZZ.01.025: U$4.P$37
ZZ.01.026: U$4.P$66
ZZ.01.027: U$4.P$95
ZZ.01.028: U$4.P$124
ZZ.01.029: U$4.P$153
ZZ.01.030: U$4.P$122
ZZ.01.031: U$4.P$154
ZZ.01.032: U$6.P$33
ZZ.01.033: U$6.P$68
ZZ.01.034: U$6.P$97
ZZ.01.035: U$6.P$126
ZZ.01.036: U$6.P$38
ZZ.01.037: U$6.P$67
ZZ.01.038: U$6.P$37
ZZ.01.039: U$6.P$66
ZZ.01.040: U$6.P$95
ZZ.01.041: U$6.P$124
ZZ.01.042: U$6.P$153
ZZ.01.043: U$6.P$122
ZZ.01.044: U$6.P$96
ZZ.01.045: U$6.P$125
ZZ.01.046: U$6.P$154
ZZ.01.047: U$6.P$155
ZZ.01.048: U$8.P$33
ZZ.01.049: U$8.P$38
ZZ.01.050: U$8.P$67
ZZ.01.051: U$8.P$37
ZZ.01.052: U$8.P$66
ZZ.01.053: U$8.P$95
ZZ.01.054: U$8.P$124
ZZ.01.055: U$8.P$153
ZZ.01.056: U$8.P$122
ZZ.01.057: U$8.P$96
ZZ.01.058: U$8.P$125
ZZ.01.059: U$8.P$154
ZZ.01.060: U$8.P$68
ZZ.01.061: U$8.P$97
ZZ.01.062: U$8.P$126
ZZ.01.063: U$8.P$155
ZZ.01.064: U$10.P$37
ZZ.01.065: U$10.P$66
ZZ.01.066: U$10.P$95
ZZ.01.067: U$10.P$124
ZZ.01.068: U$10.P$153
ZZ.01.069: U$10.P$122
ZZ.01.070: U$10.P$38
ZZ.01.071: U$10.P$67
ZZ.01.072: U$10.P$96
ZZ.01.073: U$10.P$125
ZZ.01.074: U$10.P$154
ZZ.01.075: U$10.P$33
ZZ.01.076: U$10.P$68
ZZ.01.077: U$10.P$97
ZZ.01.078: U$10.P$126
ZZ.01.079: U$10.P$155
ZZ.01.080: U$12.P$37
ZZ.01.081: U$12.P$66
ZZ.01.082: U$12.P$95
ZZ.01.083: U$12.P$124
ZZ.01.084: U$12.P$153
ZZ.01.085: U$12.P$122
ZZ.01.086: U$12.P$38
ZZ.01.087: U$12.P$67
ZZ.01.088: U$12.P$96
ZZ.01.089: U$12.P$125
ZZ.01.090: U$12.P$154
ZZ.01.091: U$12.P$33
ZZ.01.092: U$12.P$68
ZZ.01.093: U$12.P$97
ZZ.01.094: U$12.P$126
ZZ.01.095: U$12.P$155
ZZ.01.096: U$14.P$37
ZZ.01.097: U$14.P$66
ZZ.01.098: U$14.P$95
ZZ.01.099: U$14.P$124
ZZ.01.100: U$14.P$153
ZZ.01.101: U$14.P$122
ZZ.01.102: U$14.P$38
ZZ.01.103: U$14.P$67
ZZ.01.104: U$14.P$96
ZZ.01.105: U$14.P$125
ZZ.01.106: U$14.P$154
ZZ.01.107: U$14.P$33
ZZ.01.108: U$14.P$68
ZZ.01.109: U$14.P$97
ZZ.01.110: U$14.P$126
ZZ.01.111: U$14.P$155
ZZ.01.112: U$16.P$37
ZZ.01.113: U$16.P$66
ZZ.01.114: U$16.P$95
ZZ.01.115: U$16.P$124
ZZ.01.116: U$16.P$153
ZZ.01.117: U$16.P$122
ZZ.01.118: U$16.P$38
ZZ.01.119: U$16.P$67
ZZ.01.120: U$16.P$96
ZZ.01.121: U$16.P$125
ZZ.01.122: U$16.P$154
ZZ.01.123: U$16.P$33
ZZ.01.124: U$16.P$68
ZZ.01.125: U$16.P$97
ZZ.01.126: U$16.P$126
ZZ.01.127: U$16.P$155
ZZ.02.000: U$2.P$75
ZZ.02.001: U$2.P$135
ZZ.02.002: U$2.P$165
ZZ.02.003: U$2.P$104
ZZ.02.004: U$2.P$134
ZZ.02.005: U$2.P$73
ZZ.02.006: U$2.P$103
ZZ.02.007: U$2.P$163
ZZ.02.008: U$2.P$72
ZZ.02.009: U$2.P$102
ZZ.02.010: U$2.P$162
ZZ.02.011: U$2.P$161
ZZ.02.012: U$2.P$160
ZZ.02.013: U$2.P$41
ZZ.02.014: U$2.P$71
ZZ.02.015: U$2.P$101
ZZ.02.016: U$4.P$75
ZZ.02.017: U$4.P$105
ZZ.02.018: U$4.P$165
ZZ.02.019: U$4.P$74
ZZ.02.020: U$4.P$164
ZZ.02.021: U$4.P$73
ZZ.02.022: U$4.P$133
ZZ.02.023: U$4.P$163
ZZ.02.024: U$4.P$72
ZZ.02.025: U$4.P$132
ZZ.02.026: U$4.P$41
ZZ.02.027: U$4.P$71
ZZ.02.028: U$4.P$101
ZZ.02.029: U$4.P$131
ZZ.02.030: U$4.P$161
ZZ.02.031: U$4.P$162
ZZ.02.032: U$6.P$75
ZZ.02.033: U$6.P$105
ZZ.02.034: U$6.P$165
ZZ.02.035: U$6.P$74
ZZ.02.036: U$6.P$43
ZZ.02.037: U$6.P$103
ZZ.02.038: U$6.P$102
ZZ.02.039: U$6.P$41
ZZ.02.040: U$6.P$71
ZZ.02.041: U$6.P$101
ZZ.02.042: U$6.P$131
ZZ.02.043: U$6.P$161
ZZ.02.044: U$6.P$132
ZZ.02.045: U$6.P$162
ZZ.02.046: U$6.P$159
ZZ.02.047: U$6.P$164
ZZ.02.048: U$8.P$44
ZZ.02.049: U$8.P$73
ZZ.02.050: U$8.P$103
ZZ.02.051: U$8.P$102
ZZ.02.052: U$8.P$41
ZZ.02.053: U$8.P$71
ZZ.02.054: U$8.P$101
ZZ.02.055: U$8.P$131
ZZ.02.056: U$8.P$161
ZZ.02.057: U$8.P$132
ZZ.02.058: U$8.P$162
ZZ.02.059: U$8.P$163
ZZ.02.060: U$8.P$134
ZZ.02.061: U$8.P$164
ZZ.02.062: U$8.P$75
ZZ.02.063: U$8.P$135
ZZ.02.064: U$10.P$42
ZZ.02.065: U$10.P$41
ZZ.02.066: U$10.P$71
ZZ.02.067: U$10.P$101
ZZ.02.068: U$10.P$131
ZZ.02.069: U$10.P$161
ZZ.02.070: U$10.P$102
ZZ.02.071: U$10.P$132
ZZ.02.072: U$10.P$73
ZZ.02.073: U$10.P$133
ZZ.02.074: U$10.P$159
ZZ.02.075: U$10.P$44
ZZ.02.076: U$10.P$104
ZZ.02.077: U$10.P$164
ZZ.02.078: U$10.P$75
ZZ.02.079: U$10.P$135
ZZ.02.080: U$12.P$71
ZZ.02.081: U$12.P$101
ZZ.02.082: U$12.P$131
ZZ.02.083: U$12.P$161
ZZ.02.084: U$12.P$40
ZZ.02.085: U$12.P$41
ZZ.02.086: U$12.P$72
ZZ.02.087: U$12.P$132
ZZ.02.088: U$12.P$73
ZZ.02.089: U$12.P$103
ZZ.02.090: U$12.P$159
ZZ.02.091: U$12.P$44
ZZ.02.092: U$12.P$104
ZZ.02.093: U$12.P$164
ZZ.02.094: U$12.P$105
ZZ.02.095: U$12.P$135
ZZ.02.096: U$14.P$161
ZZ.02.097: U$14.P$40
ZZ.02.098: U$14.P$70
ZZ.02.099: U$14.P$130
ZZ.02.100: U$14.P$101
ZZ.02.101: U$14.P$131
ZZ.02.102: U$14.P$72
ZZ.02.103: U$14.P$162
ZZ.02.104: U$14.P$73
ZZ.02.105: U$14.P$103
ZZ.02.106: U$14.P$163
ZZ.02.107: U$14.P$74
ZZ.02.108: U$14.P$134
ZZ.02.109: U$14.P$164
ZZ.02.110: U$14.P$105
ZZ.02.111: U$14.P$135
ZZ.02.112: U$16.P$70
ZZ.02.113: U$16.P$130
ZZ.02.114: U$16.P$129
ZZ.02.115: U$16.P$41
ZZ.02.116: U$16.P$131
ZZ.02.117: U$16.P$161
ZZ.02.118: U$16.P$102
ZZ.02.119: U$16.P$132
ZZ.02.120: U$16.P$43
ZZ.02.121: U$16.P$133
ZZ.02.122: U$16.P$163
ZZ.02.123: U$16.P$44
ZZ.02.124: U$16.P$134
ZZ.02.125: U$16.P$164
ZZ.02.126: U$16.P$105
ZZ.02.127: U$16.P$135
ZZ.03.000: U$2.P$45
ZZ.03.001: U$2.P$105
ZZ.03.002: U$2.P$44
ZZ.03.003: U$2.P$74
ZZ.03.004: U$2.P$164
ZZ.03.005: U$2.P$43
ZZ.03.006: U$2.P$133
ZZ.03.007: U$2.P$159
ZZ.03.008: U$2.P$42
ZZ.03.009: U$2.P$132
ZZ.03.010: U$2.P$131
ZZ.03.011: U$2.P$130
ZZ.03.012: U$2.P$129
ZZ.03.013: U$2.P$40
ZZ.03.014: U$2.P$70
ZZ.03.015: U$2.P$100
ZZ.03.016: U$4.P$45
ZZ.03.017: U$4.P$135
ZZ.03.018: U$4.P$44
ZZ.03.019: U$4.P$104
ZZ.03.020: U$4.P$134
ZZ.03.021: U$4.P$43
ZZ.03.022: U$4.P$103
ZZ.03.023: U$4.P$159
ZZ.03.024: U$4.P$42
ZZ.03.025: U$4.P$102
ZZ.03.026: U$4.P$40
ZZ.03.027: U$4.P$70
ZZ.03.028: U$4.P$100
ZZ.03.029: U$4.P$130
ZZ.03.030: U$4.P$160
ZZ.03.031: U$4.P$129
ZZ.03.032: U$6.P$45
ZZ.03.033: U$6.P$135
ZZ.03.034: U$6.P$44
ZZ.03.035: U$6.P$104
ZZ.03.036: U$6.P$73
ZZ.03.037: U$6.P$42
ZZ.03.038: U$6.P$72
ZZ.03.039: U$6.P$40
ZZ.03.040: U$6.P$70
ZZ.03.041: U$6.P$100
ZZ.03.042: U$6.P$130
ZZ.03.043: U$6.P$160
ZZ.03.044: U$6.P$129
ZZ.03.045: U$6.P$133
ZZ.03.046: U$6.P$163
ZZ.03.047: U$6.P$134
ZZ.03.048: U$8.P$74
ZZ.03.049: U$8.P$43
ZZ.03.050: U$8.P$42
ZZ.03.051: U$8.P$72
ZZ.03.052: U$8.P$40
ZZ.03.053: U$8.P$70
ZZ.03.054: U$8.P$100
ZZ.03.055: U$8.P$130
ZZ.03.056: U$8.P$160
ZZ.03.057: U$8.P$129
ZZ.03.058: U$8.P$133
ZZ.03.059: U$8.P$159
ZZ.03.060: U$8.P$104
ZZ.03.061: U$8.P$45
ZZ.03.062: U$8.P$105
ZZ.03.063: U$8.P$165
ZZ.03.064: U$10.P$72
ZZ.03.065: U$10.P$40
ZZ.03.066: U$10.P$70
ZZ.03.067: U$10.P$100
ZZ.03.068: U$10.P$130
ZZ.03.069: U$10.P$160
ZZ.03.070: U$10.P$129
ZZ.03.071: U$10.P$162
ZZ.03.072: U$10.P$43
ZZ.03.073: U$10.P$103
ZZ.03.074: U$10.P$163
ZZ.03.075: U$10.P$74
ZZ.03.076: U$10.P$134
ZZ.03.077: U$10.P$45
ZZ.03.078: U$10.P$105
ZZ.03.079: U$10.P$165
ZZ.03.080: U$12.P$70
ZZ.03.081: U$12.P$100
ZZ.03.082: U$12.P$130
ZZ.03.083: U$12.P$160
ZZ.03.084: U$12.P$129
ZZ.03.085: U$12.P$42
ZZ.03.086: U$12.P$102
ZZ.03.087: U$12.P$162
ZZ.03.088: U$12.P$43
ZZ.03.089: U$12.P$133
ZZ.03.090: U$12.P$163
ZZ.03.091: U$12.P$74
ZZ.03.092: U$12.P$134
ZZ.03.093: U$12.P$45
ZZ.03.094: U$12.P$75
ZZ.03.095: U$12.P$165
ZZ.03.096: U$14.P$160
ZZ.03.097: U$14.P$129
ZZ.03.098: U$14.P$100
ZZ.03.099: U$14.P$41
ZZ.03.100: U$14.P$71
ZZ.03.101: U$14.P$42
ZZ.03.102: U$14.P$102
ZZ.03.103: U$14.P$132
ZZ.03.104: U$14.P$43
ZZ.03.105: U$14.P$133
ZZ.03.106: U$14.P$159
ZZ.03.107: U$14.P$44
ZZ.03.108: U$14.P$104
ZZ.03.109: U$14.P$45
ZZ.03.110: U$14.P$75
ZZ.03.111: U$14.P$165
ZZ.03.112: U$16.P$40
ZZ.03.113: U$16.P$100
ZZ.03.114: U$16.P$160
ZZ.03.115: U$16.P$71
ZZ.03.116: U$16.P$101
ZZ.03.117: U$16.P$42
ZZ.03.118: U$16.P$72
ZZ.03.119: U$16.P$162
ZZ.03.120: U$16.P$73
ZZ.03.121: U$16.P$103
ZZ.03.122: U$16.P$159
ZZ.03.123: U$16.P$74
ZZ.03.124: U$16.P$104
ZZ.03.125: U$16.P$45
ZZ.03.126: U$16.P$75
ZZ.03.127: U$16.P$165
ZZ.04.000: U$2.P$49
ZZ.04.001: U$2.P$79
ZZ.04.002: U$2.P$109
ZZ.04.003: U$2.P$139
ZZ.04.004: U$2.P$169
ZZ.04.005: U$2.P$48
ZZ.04.006: U$2.P$78
ZZ.04.007: U$2.P$108
ZZ.04.008: U$2.P$138
ZZ.04.009: U$2.P$168
ZZ.04.010: U$2.P$47
ZZ.04.011: U$2.P$77
ZZ.04.012: U$2.P$107
ZZ.04.013: U$2.P$137
ZZ.04.014: U$2.P$167
ZZ.04.015: U$2.P$136
ZZ.04.016: U$4.P$49
ZZ.04.017: U$4.P$79
ZZ.04.018: U$4.P$109
ZZ.04.019: U$4.P$139
ZZ.04.020: U$4.P$169
ZZ.04.021: U$4.P$48
ZZ.04.022: U$4.P$78
ZZ.04.023: U$4.P$108
ZZ.04.024: U$4.P$138
ZZ.04.025: U$4.P$47
ZZ.04.026: U$4.P$77
ZZ.04.027: U$4.P$107
ZZ.04.028: U$4.P$137
ZZ.04.029: U$4.P$167
ZZ.04.030: U$4.P$136
ZZ.04.031: U$4.P$168
ZZ.04.032: U$6.P$49
ZZ.04.033: U$6.P$79
ZZ.04.034: U$6.P$109
ZZ.04.035: U$6.P$139
ZZ.04.036: U$6.P$48
ZZ.04.037: U$6.P$78
ZZ.04.038: U$6.P$47
ZZ.04.039: U$6.P$77
ZZ.04.040: U$6.P$107
ZZ.04.041: U$6.P$137
ZZ.04.042: U$6.P$167
ZZ.04.043: U$6.P$136
ZZ.04.044: U$6.P$108
ZZ.04.045: U$6.P$138
ZZ.04.046: U$6.P$168
ZZ.04.047: U$6.P$169
ZZ.04.048: U$8.P$49
ZZ.04.049: U$8.P$48
ZZ.04.050: U$8.P$78
ZZ.04.051: U$8.P$47
ZZ.04.052: U$8.P$77
ZZ.04.053: U$8.P$107
ZZ.04.054: U$8.P$137
ZZ.04.055: U$8.P$167
ZZ.04.056: U$8.P$136
ZZ.04.057: U$8.P$108
ZZ.04.058: U$8.P$138
ZZ.04.059: U$8.P$168
ZZ.04.060: U$8.P$79
ZZ.04.061: U$8.P$109
ZZ.04.062: U$8.P$139
ZZ.04.063: U$8.P$169
ZZ.04.064: U$10.P$47
ZZ.04.065: U$10.P$77
ZZ.04.066: U$10.P$107
ZZ.04.067: U$10.P$137
ZZ.04.068: U$10.P$167
ZZ.04.069: U$10.P$136
ZZ.04.070: U$10.P$48
ZZ.04.071: U$10.P$78
ZZ.04.072: U$10.P$108
ZZ.04.073: U$10.P$138
ZZ.04.074: U$10.P$168
ZZ.04.075: U$10.P$49
ZZ.04.076: U$10.P$79
ZZ.04.077: U$10.P$109
ZZ.04.078: U$10.P$139
ZZ.04.079: U$10.P$169
ZZ.04.080: U$12.P$47
ZZ.04.081: U$12.P$77
ZZ.04.082: U$12.P$107
ZZ.04.083: U$12.P$137
ZZ.04.084: U$12.P$167
ZZ.04.085: U$12.P$136
ZZ.04.086: U$12.P$48
ZZ.04.087: U$12.P$78
ZZ.04.088: U$12.P$108
ZZ.04.089: U$12.P$138
ZZ.04.090: U$12.P$168
ZZ.04.091: U$12.P$49
ZZ.04.092: U$12.P$79
ZZ.04.093: U$12.P$109
ZZ.04.094: U$12.P$139
ZZ.04.095: U$12.P$169
ZZ.04.096: U$14.P$47
ZZ.04.097: U$14.P$77
ZZ.04.098: U$14.P$107
ZZ.04.099: U$14.P$137
ZZ.04.100: U$14.P$167
ZZ.04.101: U$14.P$136
ZZ.04.102: U$14.P$48
ZZ.04.103: U$14.P$78
ZZ.04.104: U$14.P$108
ZZ.04.105: U$14.P$138
ZZ.04.106: U$14.P$168
ZZ.04.107: U$14.P$49
ZZ.04.108: U$14.P$79
ZZ.04.109: U$14.P$109
ZZ.04.110: U$14.P$139
ZZ.04.111: U$14.P$169
ZZ.04.112: U$16.P$47
ZZ.04.113: U$16.P$77
ZZ.04.114: U$16.P$107
ZZ.04.115: U$16.P$137
ZZ.04.116: U$16.P$167
ZZ.04.117: U$16.P$136
ZZ.04.118: U$16.P$48
ZZ.04.119: U$16.P$78
ZZ.04.120: U$16.P$108
ZZ.04.121: U$16.P$138
ZZ.04.122: U$16.P$168
ZZ.04.123: U$16.P$49
ZZ.04.124: U$16.P$79
ZZ.04.125: U$16.P$109
ZZ.04.126: U$16.P$139
ZZ.04.127: U$16.P$169
ZZ.05.000: U$2.P$50
ZZ.05.001: U$2.P$80
ZZ.05.002: U$2.P$110
ZZ.05.003: U$2.P$140
ZZ.05.004: U$2.P$170
ZZ.05.005: U$2.P$166
ZZ.05.006: U$2.P$51
ZZ.05.007: U$2.P$81
ZZ.05.008: U$2.P$111
ZZ.05.009: U$2.P$141
ZZ.05.010: U$2.P$171
ZZ.05.011: U$2.P$52
ZZ.05.012: U$2.P$82
ZZ.05.013: U$2.P$112
ZZ.05.014: U$2.P$142
ZZ.05.015: U$2.P$172
ZZ.05.016: U$4.P$50
ZZ.05.017: U$4.P$80
ZZ.05.018: U$4.P$110
ZZ.05.019: U$4.P$140
ZZ.05.020: U$4.P$170
ZZ.05.021: U$4.P$166
ZZ.05.022: U$4.P$51
ZZ.05.023: U$4.P$81
ZZ.05.024: U$4.P$111
ZZ.05.025: U$4.P$141
ZZ.05.026: U$4.P$52
ZZ.05.027: U$4.P$82
ZZ.05.028: U$4.P$112
ZZ.05.029: U$4.P$142
ZZ.05.030: U$4.P$172
ZZ.05.031: U$4.P$171
ZZ.05.032: U$6.P$50
ZZ.05.033: U$6.P$80
ZZ.05.034: U$6.P$110
ZZ.05.035: U$6.P$140
ZZ.05.036: U$6.P$51
ZZ.05.037: U$6.P$81
ZZ.05.038: U$6.P$111
ZZ.05.039: U$6.P$52
ZZ.05.040: U$6.P$82
ZZ.05.041: U$6.P$112
ZZ.05.042: U$6.P$142
ZZ.05.043: U$6.P$172
ZZ.05.044: U$6.P$141
ZZ.05.045: U$6.P$171
ZZ.05.046: U$6.P$170
ZZ.05.047: U$6.P$166
ZZ.05.048: U$8.P$50
ZZ.05.049: U$8.P$51
ZZ.05.050: U$8.P$81
ZZ.05.051: U$8.P$111
ZZ.05.052: U$8.P$52
ZZ.05.053: U$8.P$82
ZZ.05.054: U$8.P$112
ZZ.05.055: U$8.P$142
ZZ.05.056: U$8.P$172
ZZ.05.057: U$8.P$141
ZZ.05.058: U$8.P$171
ZZ.05.059: U$8.P$80
ZZ.05.060: U$8.P$110
ZZ.05.061: U$8.P$140
ZZ.05.062: U$8.P$170
ZZ.05.063: U$8.P$166
ZZ.05.064: U$10.P$51
ZZ.05.065: U$10.P$52
ZZ.05.066: U$10.P$82
ZZ.05.067: U$10.P$112
ZZ.05.068: U$10.P$142
ZZ.05.069: U$10.P$172
ZZ.05.070: U$10.P$81
ZZ.05.071: U$10.P$111
ZZ.05.072: U$10.P$141
ZZ.05.073: U$10.P$171
ZZ.05.074: U$10.P$50
ZZ.05.075: U$10.P$80
ZZ.05.076: U$10.P$110
ZZ.05.077: U$10.P$140
ZZ.05.078: U$10.P$170
ZZ.05.079: U$10.P$166
ZZ.05.080: U$12.P$52
ZZ.05.081: U$12.P$82
ZZ.05.082: U$12.P$112
ZZ.05.083: U$12.P$142
ZZ.05.084: U$12.P$172
ZZ.05.085: U$12.P$51
ZZ.05.086: U$12.P$81
ZZ.05.087: U$12.P$111
ZZ.05.088: U$12.P$141
ZZ.05.089: U$12.P$171
ZZ.05.090: U$12.P$50
ZZ.05.091: U$12.P$80
ZZ.05.092: U$12.P$110
ZZ.05.093: U$12.P$140
ZZ.05.094: U$12.P$170
ZZ.05.095: U$12.P$166
ZZ.05.096: U$14.P$52
ZZ.05.097: U$14.P$82
ZZ.05.098: U$14.P$112
ZZ.05.099: U$14.P$142
ZZ.05.100: U$14.P$172
ZZ.05.101: U$14.P$51
ZZ.05.102: U$14.P$81
ZZ.05.103: U$14.P$111
ZZ.05.104: U$14.P$141
ZZ.05.105: U$14.P$171
ZZ.05.106: U$14.P$50
ZZ.05.107: U$14.P$80
ZZ.05.108: U$14.P$110
ZZ.05.109: U$14.P$140
ZZ.05.110: U$14.P$170
ZZ.05.111: U$14.P$166
ZZ.05.112: U$16.P$52
ZZ.05.113: U$16.P$82
ZZ.05.114: U$16.P$112
ZZ.05.115: U$16.P$142
ZZ.05.116: U$16.P$172
ZZ.05.117: U$16.P$51
ZZ.05.118: U$16.P$81
ZZ.05.119: U$16.P$111
ZZ.05.120: U$16.P$141
ZZ.05.121: U$16.P$171
ZZ.05.122: U$16.P$50
ZZ.05.123: U$16.P$80
ZZ.05.124: U$16.P$110
ZZ.05.125: U$16.P$140
ZZ.05.126: U$16.P$170
ZZ.05.127: U$16.P$166
ZZ.06.000: U$2.P$57
ZZ.06.001: U$2.P$87
ZZ.06.002: U$2.P$117
ZZ.06.003: U$2.P$178
ZZ.06.004: U$2.P$145
ZZ.06.005: U$2.P$58
ZZ.06.006: U$2.P$88
ZZ.06.007: U$2.P$118
ZZ.06.008: U$2.P$149
ZZ.06.009: U$2.P$144
ZZ.06.010: U$2.P$59
ZZ.06.011: U$2.P$89
ZZ.06.012: U$2.P$119
ZZ.06.013: U$2.P$179
ZZ.06.014: U$2.P$173
ZZ.06.015: U$2.P$143
ZZ.06.016: U$4.P$57
ZZ.06.017: U$4.P$87
ZZ.06.018: U$4.P$117
ZZ.06.019: U$4.P$178
ZZ.06.020: U$4.P$145
ZZ.06.021: U$4.P$58
ZZ.06.022: U$4.P$88
ZZ.06.023: U$4.P$118
ZZ.06.024: U$4.P$149
ZZ.06.025: U$4.P$59
ZZ.06.026: U$4.P$89
ZZ.06.027: U$4.P$119
ZZ.06.028: U$4.P$179
ZZ.06.029: U$4.P$173
ZZ.06.030: U$4.P$143
ZZ.06.031: U$4.P$144
ZZ.06.032: U$6.P$57
ZZ.06.033: U$6.P$87
ZZ.06.034: U$6.P$117
ZZ.06.035: U$6.P$178
ZZ.06.036: U$6.P$58
ZZ.06.037: U$6.P$88
ZZ.06.038: U$6.P$59
ZZ.06.039: U$6.P$89
ZZ.06.040: U$6.P$119
ZZ.06.041: U$6.P$179
ZZ.06.042: U$6.P$173
ZZ.06.043: U$6.P$143
ZZ.06.044: U$6.P$118
ZZ.06.045: U$6.P$149
ZZ.06.046: U$6.P$144
ZZ.06.047: U$6.P$145
ZZ.06.048: U$8.P$57
ZZ.06.049: U$8.P$58
ZZ.06.050: U$8.P$88
ZZ.06.051: U$8.P$59
ZZ.06.052: U$8.P$89
ZZ.06.053: U$8.P$119
ZZ.06.054: U$8.P$179
ZZ.06.055: U$8.P$173
ZZ.06.056: U$8.P$143
ZZ.06.057: U$8.P$118
ZZ.06.058: U$8.P$149
ZZ.06.059: U$8.P$144
ZZ.06.060: U$8.P$87
ZZ.06.061: U$8.P$117
ZZ.06.062: U$8.P$178
ZZ.06.063: U$8.P$145
ZZ.06.064: U$10.P$59
ZZ.06.065: U$10.P$89
ZZ.06.066: U$10.P$119
ZZ.06.067: U$10.P$179
ZZ.06.068: U$10.P$173
ZZ.06.069: U$10.P$143
ZZ.06.070: U$10.P$58
ZZ.06.071: U$10.P$88
ZZ.06.072: U$10.P$118
ZZ.06.073: U$10.P$149
ZZ.06.074: U$10.P$144
ZZ.06.075: U$10.P$57
ZZ.06.076: U$10.P$87
ZZ.06.077: U$10.P$117
ZZ.06.078: U$10.P$178
ZZ.06.079: U$10.P$145
ZZ.06.080: U$12.P$59
ZZ.06.081: U$12.P$89
ZZ.06.082: U$12.P$119
ZZ.06.083: U$12.P$179
ZZ.06.084: U$12.P$173
ZZ.06.085: U$12.P$143
ZZ.06.086: U$12.P$58
ZZ.06.087: U$12.P$88
ZZ.06.088: U$12.P$118
ZZ.06.089: U$12.P$149
ZZ.06.090: U$12.P$144
ZZ.06.091: U$12.P$57
ZZ.06.092: U$12.P$87
ZZ.06.093: U$12.P$117
ZZ.06.094: U$12.P$178
ZZ.06.095: U$12.P$145
ZZ.06.096: U$14.P$59
ZZ.06.097: U$14.P$89
ZZ.06.098: U$14.P$119
ZZ.06.099: U$14.P$179
ZZ.06.100: U$14.P$173
ZZ.06.101: U$14.P$143
ZZ.06.102: U$14.P$58
ZZ.06.103: U$14.P$88
ZZ.06.104: U$14.P$118
ZZ.06.105: U$14.P$149
ZZ.06.106: U$14.P$144
ZZ.06.107: U$14.P$57
ZZ.06.108: U$14.P$87
ZZ.06.109: U$14.P$117
ZZ.06.110: U$14.P$178
ZZ.06.111: U$14.P$145
ZZ.06.112: U$16.P$59
ZZ.06.113: U$16.P$89
ZZ.06.114: U$16.P$119
ZZ.06.115: U$16.P$179
ZZ.06.116: U$16.P$173
ZZ.06.117: U$16.P$143
ZZ.06.118: U$16.P$58
ZZ.06.119: U$16.P$88
ZZ.06.120: U$16.P$118
ZZ.06.121: U$16.P$149
ZZ.06.122: U$16.P$144
ZZ.06.123: U$16.P$57
ZZ.06.124: U$16.P$87
ZZ.06.125: U$16.P$117
ZZ.06.126: U$16.P$178
ZZ.06.127: U$16.P$145
ZZ.07.000: U$2.P$54
ZZ.07.001: U$2.P$84
ZZ.07.002: U$2.P$114
ZZ.07.003: U$2.P$147
ZZ.07.004: U$2.P$176
ZZ.07.005: U$2.P$174
ZZ.07.006: U$2.P$55
ZZ.07.007: U$2.P$85
ZZ.07.008: U$2.P$115
ZZ.07.009: U$2.P$177
ZZ.07.010: U$2.P$146
ZZ.07.011: U$2.P$56
ZZ.07.012: U$2.P$86
ZZ.07.013: U$2.P$116
ZZ.07.014: U$2.P$148
ZZ.07.015: U$2.P$175
ZZ.07.016: U$4.P$54
ZZ.07.017: U$4.P$84
ZZ.07.018: U$4.P$114
ZZ.07.019: U$4.P$147
ZZ.07.020: U$4.P$176
ZZ.07.021: U$4.P$174
ZZ.07.022: U$4.P$55
ZZ.07.023: U$4.P$85
ZZ.07.024: U$4.P$115
ZZ.07.025: U$4.P$177
ZZ.07.026: U$4.P$56
ZZ.07.027: U$4.P$86
ZZ.07.028: U$4.P$116
ZZ.07.029: U$4.P$148
ZZ.07.030: U$4.P$175
ZZ.07.031: U$4.P$146
ZZ.07.032: U$6.P$54
ZZ.07.033: U$6.P$84
ZZ.07.034: U$6.P$114
ZZ.07.035: U$6.P$147
ZZ.07.036: U$6.P$55
ZZ.07.037: U$6.P$85
ZZ.07.038: U$6.P$115
ZZ.07.039: U$6.P$56
ZZ.07.040: U$6.P$86
ZZ.07.041: U$6.P$116
ZZ.07.042: U$6.P$148
ZZ.07.043: U$6.P$175
ZZ.07.044: U$6.P$177
ZZ.07.045: U$6.P$146
ZZ.07.046: U$6.P$176
ZZ.07.047: U$6.P$174
ZZ.07.048: U$8.P$54
ZZ.07.049: U$8.P$55
ZZ.07.050: U$8.P$85
ZZ.07.051: U$8.P$115
ZZ.07.052: U$8.P$56
ZZ.07.053: U$8.P$86
ZZ.07.054: U$8.P$116
ZZ.07.055: U$8.P$148
ZZ.07.056: U$8.P$175
ZZ.07.057: U$8.P$177
ZZ.07.058: U$8.P$146
ZZ.07.059: U$8.P$84
ZZ.07.060: U$8.P$114
ZZ.07.061: U$8.P$147
ZZ.07.062: U$8.P$176
ZZ.07.063: U$8.P$174
ZZ.07.064: U$10.P$55
ZZ.07.065: U$10.P$56
ZZ.07.066: U$10.P$86
ZZ.07.067: U$10.P$116
ZZ.07.068: U$10.P$148
ZZ.07.069: U$10.P$175
ZZ.07.070: U$10.P$85
ZZ.07.071: U$10.P$115
ZZ.07.072: U$10.P$177
ZZ.07.073: U$10.P$146
ZZ.07.074: U$10.P$54
ZZ.07.075: U$10.P$84
ZZ.07.076: U$10.P$114
ZZ.07.077: U$10.P$147
ZZ.07.078: U$10.P$176
ZZ.07.079: U$10.P$174
ZZ.07.080: U$12.P$56
ZZ.07.081: U$12.P$86
ZZ.07.082: U$12.P$116
ZZ.07.083: U$12.P$148
ZZ.07.084: U$12.P$175
ZZ.07.085: U$12.P$55
ZZ.07.086: U$12.P$85
ZZ.07.087: U$12.P$115
ZZ.07.088: U$12.P$177
ZZ.07.089: U$12.P$146
ZZ.07.090: U$12.P$54
ZZ.07.091: U$12.P$84
ZZ.07.092: U$12.P$114
ZZ.07.093: U$12.P$147
ZZ.07.094: U$12.P$176
ZZ.07.095: U$12.P$174
ZZ.07.096: U$14.P$56
ZZ.07.097: U$14.P$86
ZZ.07.098: U$14.P$116
ZZ.07.099: U$14.P$148
ZZ.07.100: U$14.P$175
ZZ.07.101: U$14.P$55
ZZ.07.102: U$14.P$85
ZZ.07.103: U$14.P$115
ZZ.07.104: U$14.P$177
ZZ.07.105: U$14.P$146
ZZ.07.106: U$14.P$54
ZZ.07.107: U$14.P$84
ZZ.07.108: U$14.P$114
ZZ.07.109: U$14.P$147
ZZ.07.110: U$14.P$176
ZZ.07.111: U$14.P$174
ZZ.07.112: U$16.P$56
ZZ.07.113: U$16.P$86
ZZ.07.114: U$16.P$116
ZZ.07.115: U$16.P$148
ZZ.07.116: U$16.P$175
ZZ.07.117: U$16.P$55
ZZ.07.118: U$16.P$85
ZZ.07.119: U$16.P$115
ZZ.07.120: U$16.P$177
ZZ.07.121: U$16.P$146
ZZ.07.122: U$16.P$54
ZZ.07.123: U$16.P$84
ZZ.07.124: U$16.P$114
ZZ.07.125: U$16.P$147
ZZ.07.126: U$16.P$176
ZZ.07.127: U$16.P$174
ZZ.08.000: U$1.P$38
ZZ.08.001: U$1.P$98
ZZ.08.002: U$1.P$158
ZZ.08.003: U$1.P$97
ZZ.08.004: U$1.P$127
ZZ.08.005: U$1.P$36
ZZ.08.006: U$1.P$126
ZZ.08.007: U$1.P$156
ZZ.08.008: U$1.P$35
ZZ.08.009: U$1.P$95
ZZ.08.010: U$1.P$155
ZZ.08.011: U$1.P$122
ZZ.08.012: U$1.P$34
ZZ.08.013: U$1.P$64
ZZ.08.014: U$1.P$94
ZZ.08.015: U$1.P$124
ZZ.08.016: U$3.P$38
ZZ.08.017: U$3.P$98
ZZ.08.018: U$3.P$158
ZZ.08.019: U$3.P$97
ZZ.08.020: U$3.P$127
ZZ.08.021: U$3.P$66
ZZ.08.022: U$3.P$126
ZZ.08.023: U$3.P$156
ZZ.08.024: U$3.P$65
ZZ.08.025: U$3.P$34
ZZ.08.026: U$3.P$64
ZZ.08.027: U$3.P$94
ZZ.08.028: U$3.P$124
ZZ.08.029: U$3.P$154
ZZ.08.030: U$3.P$125
ZZ.08.031: U$3.P$155
ZZ.08.032: U$5.P$68
ZZ.08.033: U$5.P$128
ZZ.08.034: U$5.P$158
ZZ.08.035: U$5.P$97
ZZ.08.036: U$5.P$36
ZZ.08.037: U$5.P$96
ZZ.08.038: U$5.P$95
ZZ.08.039: U$5.P$34
ZZ.08.040: U$5.P$64
ZZ.08.041: U$5.P$94
ZZ.08.042: U$5.P$124
ZZ.08.043: U$5.P$154
ZZ.08.044: U$5.P$125
ZZ.08.045: U$5.P$155
ZZ.08.046: U$5.P$152
ZZ.08.047: U$5.P$157
ZZ.08.048: U$7.P$67
ZZ.08.049: U$7.P$66
ZZ.08.050: U$7.P$96
ZZ.08.051: U$7.P$95
ZZ.08.052: U$7.P$34
ZZ.08.053: U$7.P$64
ZZ.08.054: U$7.P$94
ZZ.08.055: U$7.P$124
ZZ.08.056: U$7.P$154
ZZ.08.057: U$7.P$125
ZZ.08.058: U$7.P$155
ZZ.08.059: U$7.P$152
ZZ.08.060: U$7.P$127
ZZ.08.061: U$7.P$157
ZZ.08.062: U$7.P$98
ZZ.08.063: U$7.P$158
ZZ.08.064: U$9.P$65
ZZ.08.065: U$9.P$34
ZZ.08.066: U$9.P$64
ZZ.08.067: U$9.P$94
ZZ.08.068: U$9.P$124
ZZ.08.069: U$9.P$154
ZZ.08.070: U$9.P$95
ZZ.08.071: U$9.P$155
ZZ.08.072: U$9.P$36
ZZ.08.073: U$9.P$126
ZZ.08.074: U$9.P$156
ZZ.08.075: U$9.P$67
ZZ.08.076: U$9.P$97
ZZ.08.077: U$9.P$157
ZZ.08.078: U$9.P$68
ZZ.08.079: U$9.P$158
ZZ.08.080: U$11.P$94
ZZ.08.081: U$11.P$124
ZZ.08.082: U$11.P$154
ZZ.08.083: U$11.P$33
ZZ.08.084: U$11.P$63
ZZ.08.085: U$11.P$64
ZZ.08.086: U$11.P$95
ZZ.08.087: U$11.P$125
ZZ.08.088: U$11.P$66
ZZ.08.089: U$11.P$96
ZZ.08.090: U$11.P$156
ZZ.08.091: U$11.P$37
ZZ.08.092: U$11.P$97
ZZ.08.093: U$11.P$157
ZZ.08.094: U$11.P$98
ZZ.08.095: U$11.P$158
ZZ.08.096: U$13.P$33
ZZ.08.097: U$13.P$93
ZZ.08.098: U$13.P$153
ZZ.08.099: U$13.P$34
ZZ.08.100: U$13.P$124
ZZ.08.101: U$13.P$154
ZZ.08.102: U$13.P$95
ZZ.08.103: U$13.P$125
ZZ.08.104: U$13.P$66
ZZ.08.105: U$13.P$126
ZZ.08.106: U$13.P$156
ZZ.08.107: U$13.P$37
ZZ.08.108: U$13.P$97
ZZ.08.109: U$13.P$157
ZZ.08.110: U$13.P$98
ZZ.08.111: U$13.P$128
ZZ.08.112: U$15.P$63
ZZ.08.113: U$15.P$123
ZZ.08.114: U$15.P$122
ZZ.08.115: U$15.P$34
ZZ.08.116: U$15.P$94
ZZ.08.117: U$15.P$154
ZZ.08.118: U$15.P$65
ZZ.08.119: U$15.P$155
ZZ.08.120: U$15.P$66
ZZ.08.121: U$15.P$126
ZZ.08.122: U$15.P$156
ZZ.08.123: U$15.P$37
ZZ.08.124: U$15.P$97
ZZ.08.125: U$15.P$157
ZZ.08.126: U$15.P$68
ZZ.08.127: U$15.P$128
ZZ.09.000: U$1.P$68
ZZ.09.001: U$1.P$128
ZZ.09.002: U$1.P$37
ZZ.09.003: U$1.P$67
ZZ.09.004: U$1.P$157
ZZ.09.005: U$1.P$66
ZZ.09.006: U$1.P$96
ZZ.09.007: U$1.P$152
ZZ.09.008: U$1.P$65
ZZ.09.009: U$1.P$125
ZZ.09.010: U$1.P$154
ZZ.09.011: U$1.P$153
ZZ.09.012: U$1.P$33
ZZ.09.013: U$1.P$63
ZZ.09.014: U$1.P$93
ZZ.09.015: U$1.P$123
ZZ.09.016: U$3.P$68
ZZ.09.017: U$3.P$128
ZZ.09.018: U$3.P$37
ZZ.09.019: U$3.P$67
ZZ.09.020: U$3.P$157
ZZ.09.021: U$3.P$36
ZZ.09.022: U$3.P$96
ZZ.09.023: U$3.P$35
ZZ.09.024: U$3.P$95
ZZ.09.025: U$3.P$33
ZZ.09.026: U$3.P$63
ZZ.09.027: U$3.P$93
ZZ.09.028: U$3.P$123
ZZ.09.029: U$3.P$153
ZZ.09.030: U$3.P$122
ZZ.09.031: U$3.P$152
ZZ.09.032: U$5.P$38
ZZ.09.033: U$5.P$98
ZZ.09.034: U$5.P$37
ZZ.09.035: U$5.P$67
ZZ.09.036: U$5.P$66
ZZ.09.037: U$5.P$35
ZZ.09.038: U$5.P$65
ZZ.09.039: U$5.P$33
ZZ.09.040: U$5.P$63
ZZ.09.041: U$5.P$93
ZZ.09.042: U$5.P$123
ZZ.09.043: U$5.P$153
ZZ.09.044: U$5.P$122
ZZ.09.045: U$5.P$126
ZZ.09.046: U$5.P$156
ZZ.09.047: U$5.P$127
ZZ.09.048: U$7.P$37
ZZ.09.049: U$7.P$36
ZZ.09.050: U$7.P$35
ZZ.09.051: U$7.P$65
ZZ.09.052: U$7.P$33
ZZ.09.053: U$7.P$63
ZZ.09.054: U$7.P$93
ZZ.09.055: U$7.P$123
ZZ.09.056: U$7.P$153
ZZ.09.057: U$7.P$122
ZZ.09.058: U$7.P$126
ZZ.09.059: U$7.P$156
ZZ.09.060: U$7.P$97
ZZ.09.061: U$7.P$38
ZZ.09.062: U$7.P$68
ZZ.09.063: U$7.P$128
ZZ.09.064: U$9.P$35
ZZ.09.065: U$9.P$33
ZZ.09.066: U$9.P$63
ZZ.09.067: U$9.P$93
ZZ.09.068: U$9.P$123
ZZ.09.069: U$9.P$153
ZZ.09.070: U$9.P$122
ZZ.09.071: U$9.P$125
ZZ.09.072: U$9.P$66
ZZ.09.073: U$9.P$96
ZZ.09.074: U$9.P$152
ZZ.09.075: U$9.P$37
ZZ.09.076: U$9.P$127
ZZ.09.077: U$9.P$38
ZZ.09.078: U$9.P$98
ZZ.09.079: U$9.P$128
ZZ.09.080: U$11.P$93
ZZ.09.081: U$11.P$123
ZZ.09.082: U$11.P$153
ZZ.09.083: U$11.P$122
ZZ.09.084: U$11.P$34
ZZ.09.085: U$11.P$35
ZZ.09.086: U$11.P$65
ZZ.09.087: U$11.P$155
ZZ.09.088: U$11.P$36
ZZ.09.089: U$11.P$126
ZZ.09.090: U$11.P$152
ZZ.09.091: U$11.P$67
ZZ.09.092: U$11.P$127
ZZ.09.093: U$11.P$38
ZZ.09.094: U$11.P$68
ZZ.09.095: U$11.P$128
ZZ.09.096: U$13.P$122
ZZ.09.097: U$13.P$63
ZZ.09.098: U$13.P$123
ZZ.09.099: U$13.P$64
ZZ.09.100: U$13.P$94
ZZ.09.101: U$13.P$35
ZZ.09.102: U$13.P$65
ZZ.09.103: U$13.P$155
ZZ.09.104: U$13.P$36
ZZ.09.105: U$13.P$96
ZZ.09.106: U$13.P$152
ZZ.09.107: U$13.P$67
ZZ.09.108: U$13.P$127
ZZ.09.109: U$13.P$38
ZZ.09.110: U$13.P$68
ZZ.09.111: U$13.P$158
ZZ.09.112: U$15.P$33
ZZ.09.113: U$15.P$93
ZZ.09.114: U$15.P$153
ZZ.09.115: U$15.P$64
ZZ.09.116: U$15.P$124
ZZ.09.117: U$15.P$35
ZZ.09.118: U$15.P$95
ZZ.09.119: U$15.P$125
ZZ.09.120: U$15.P$36
ZZ.09.121: U$15.P$96
ZZ.09.122: U$15.P$152
ZZ.09.123: U$15.P$67
ZZ.09.124: U$15.P$127
ZZ.09.125: U$15.P$38
ZZ.09.126: U$15.P$98
ZZ.09.127: U$15.P$158
ZZ.10.000: U$1.P$42
ZZ.10.001: U$1.P$72
ZZ.10.002: U$1.P$102
ZZ.10.003: U$1.P$132
ZZ.10.004: U$1.P$162
ZZ.10.005: U$1.P$41
ZZ.10.006: U$1.P$71
ZZ.10.007: U$1.P$101
ZZ.10.008: U$1.P$131
ZZ.10.009: U$1.P$161
ZZ.10.010: U$1.P$40
ZZ.10.011: U$1.P$70
ZZ.10.012: U$1.P$100
ZZ.10.013: U$1.P$130
ZZ.10.014: U$1.P$160
ZZ.10.015: U$1.P$129
ZZ.10.016: U$3.P$42
ZZ.10.017: U$3.P$72
ZZ.10.018: U$3.P$102
ZZ.10.019: U$3.P$132
ZZ.10.020: U$3.P$162
ZZ.10.021: U$3.P$41
ZZ.10.022: U$3.P$71
ZZ.10.023: U$3.P$101
ZZ.10.024: U$3.P$40
ZZ.10.025: U$3.P$70
ZZ.10.026: U$3.P$100
ZZ.10.027: U$3.P$130
ZZ.10.028: U$3.P$160
ZZ.10.029: U$3.P$129
ZZ.10.030: U$3.P$131
ZZ.10.031: U$3.P$161
ZZ.10.032: U$5.P$42
ZZ.10.033: U$5.P$72
ZZ.10.034: U$5.P$102
ZZ.10.035: U$5.P$132
ZZ.10.036: U$5.P$41
ZZ.10.037: U$5.P$71
ZZ.10.038: U$5.P$40
ZZ.10.039: U$5.P$70
ZZ.10.040: U$5.P$100
ZZ.10.041: U$5.P$130
ZZ.10.042: U$5.P$160
ZZ.10.043: U$5.P$129
ZZ.10.044: U$5.P$101
ZZ.10.045: U$5.P$131
ZZ.10.046: U$5.P$161
ZZ.10.047: U$5.P$162
ZZ.10.048: U$7.P$42
ZZ.10.049: U$7.P$41
ZZ.10.050: U$7.P$71
ZZ.10.051: U$7.P$40
ZZ.10.052: U$7.P$70
ZZ.10.053: U$7.P$100
ZZ.10.054: U$7.P$130
ZZ.10.055: U$7.P$160
ZZ.10.056: U$7.P$129
ZZ.10.057: U$7.P$101
ZZ.10.058: U$7.P$131
ZZ.10.059: U$7.P$161
ZZ.10.060: U$7.P$72
ZZ.10.061: U$7.P$102
ZZ.10.062: U$7.P$132
ZZ.10.063: U$7.P$162
ZZ.10.064: U$9.P$40
ZZ.10.065: U$9.P$70
ZZ.10.066: U$9.P$100
ZZ.10.067: U$9.P$130
ZZ.10.068: U$9.P$160
ZZ.10.069: U$9.P$129
ZZ.10.070: U$9.P$41
ZZ.10.071: U$9.P$71
ZZ.10.072: U$9.P$101
ZZ.10.073: U$9.P$131
ZZ.10.074: U$9.P$161
ZZ.10.075: U$9.P$42
ZZ.10.076: U$9.P$72
ZZ.10.077: U$9.P$102
ZZ.10.078: U$9.P$132
ZZ.10.079: U$9.P$162
ZZ.10.080: U$11.P$40
ZZ.10.081: U$11.P$70
ZZ.10.082: U$11.P$100
ZZ.10.083: U$11.P$130
ZZ.10.084: U$11.P$160
ZZ.10.085: U$11.P$129
ZZ.10.086: U$11.P$41
ZZ.10.087: U$11.P$71
ZZ.10.088: U$11.P$101
ZZ.10.089: U$11.P$131
ZZ.10.090: U$11.P$161
ZZ.10.091: U$11.P$42
ZZ.10.092: U$11.P$72
ZZ.10.093: U$11.P$102
ZZ.10.094: U$11.P$132
ZZ.10.095: U$11.P$162
ZZ.10.096: U$13.P$40
ZZ.10.097: U$13.P$70
ZZ.10.098: U$13.P$100
ZZ.10.099: U$13.P$130
ZZ.10.100: U$13.P$160
ZZ.10.101: U$13.P$129
ZZ.10.102: U$13.P$41
ZZ.10.103: U$13.P$71
ZZ.10.104: U$13.P$101
ZZ.10.105: U$13.P$131
ZZ.10.106: U$13.P$161
ZZ.10.107: U$13.P$42
ZZ.10.108: U$13.P$72
ZZ.10.109: U$13.P$102
ZZ.10.110: U$13.P$132
ZZ.10.111: U$13.P$162
ZZ.10.112: U$15.P$40
ZZ.10.113: U$15.P$70
ZZ.10.114: U$15.P$100
ZZ.10.115: U$15.P$130
ZZ.10.116: U$15.P$160
ZZ.10.117: U$15.P$129
ZZ.10.118: U$15.P$41
ZZ.10.119: U$15.P$71
ZZ.10.120: U$15.P$101
ZZ.10.121: U$15.P$131
ZZ.10.122: U$15.P$161
ZZ.10.123: U$15.P$42
ZZ.10.124: U$15.P$72
ZZ.10.125: U$15.P$102
ZZ.10.126: U$15.P$132
ZZ.10.127: U$15.P$162
ZZ.11.000: U$1.P$43
ZZ.11.001: U$1.P$73
ZZ.11.002: U$1.P$103
ZZ.11.003: U$1.P$133
ZZ.11.004: U$1.P$163
ZZ.11.005: U$1.P$159
ZZ.11.006: U$1.P$44
ZZ.11.007: U$1.P$74
ZZ.11.008: U$1.P$104
ZZ.11.009: U$1.P$134
ZZ.11.010: U$1.P$164
ZZ.11.011: U$1.P$45
ZZ.11.012: U$1.P$75
ZZ.11.013: U$1.P$105
ZZ.11.014: U$1.P$135
ZZ.11.015: U$1.P$165
ZZ.11.016: U$3.P$43
ZZ.11.017: U$3.P$73
ZZ.11.018: U$3.P$103
ZZ.11.019: U$3.P$133
ZZ.11.020: U$3.P$163
ZZ.11.021: U$3.P$159
ZZ.11.022: U$3.P$44
ZZ.11.023: U$3.P$74
ZZ.11.024: U$3.P$104
ZZ.11.025: U$3.P$45
ZZ.11.026: U$3.P$75
ZZ.11.027: U$3.P$105
ZZ.11.028: U$3.P$135
ZZ.11.029: U$3.P$165
ZZ.11.030: U$3.P$134
ZZ.11.031: U$3.P$164
ZZ.11.032: U$5.P$43
ZZ.11.033: U$5.P$73
ZZ.11.034: U$5.P$103
ZZ.11.035: U$5.P$133
ZZ.11.036: U$5.P$44
ZZ.11.037: U$5.P$74
ZZ.11.038: U$5.P$104
ZZ.11.039: U$5.P$45
ZZ.11.040: U$5.P$75
ZZ.11.041: U$5.P$105
ZZ.11.042: U$5.P$135
ZZ.11.043: U$5.P$165
ZZ.11.044: U$5.P$134
ZZ.11.045: U$5.P$164
ZZ.11.046: U$5.P$163
ZZ.11.047: U$5.P$159
ZZ.11.048: U$7.P$43
ZZ.11.049: U$7.P$44
ZZ.11.050: U$7.P$74
ZZ.11.051: U$7.P$104
ZZ.11.052: U$7.P$45
ZZ.11.053: U$7.P$75
ZZ.11.054: U$7.P$105
ZZ.11.055: U$7.P$135
ZZ.11.056: U$7.P$165
ZZ.11.057: U$7.P$134
ZZ.11.058: U$7.P$164
ZZ.11.059: U$7.P$73
ZZ.11.060: U$7.P$103
ZZ.11.061: U$7.P$133
ZZ.11.062: U$7.P$163
ZZ.11.063: U$7.P$159
ZZ.11.064: U$9.P$44
ZZ.11.065: U$9.P$45
ZZ.11.066: U$9.P$75
ZZ.11.067: U$9.P$105
ZZ.11.068: U$9.P$135
ZZ.11.069: U$9.P$165
ZZ.11.070: U$9.P$74
ZZ.11.071: U$9.P$104
ZZ.11.072: U$9.P$134
ZZ.11.073: U$9.P$164
ZZ.11.074: U$9.P$43
ZZ.11.075: U$9.P$73
ZZ.11.076: U$9.P$103
ZZ.11.077: U$9.P$133
ZZ.11.078: U$9.P$163
ZZ.11.079: U$9.P$159
ZZ.11.080: U$11.P$45
ZZ.11.081: U$11.P$75
ZZ.11.082: U$11.P$105
ZZ.11.083: U$11.P$135
ZZ.11.084: U$11.P$165
ZZ.11.085: U$11.P$44
ZZ.11.086: U$11.P$74
ZZ.11.087: U$11.P$104
ZZ.11.088: U$11.P$134
ZZ.11.089: U$11.P$164
ZZ.11.090: U$11.P$43
ZZ.11.091: U$11.P$73
ZZ.11.092: U$11.P$103
ZZ.11.093: U$11.P$133
ZZ.11.094: U$11.P$163
ZZ.11.095: U$11.P$159
ZZ.11.096: U$13.P$45
ZZ.11.097: U$13.P$75
ZZ.11.098: U$13.P$105
ZZ.11.099: U$13.P$135
ZZ.11.100: U$13.P$165
ZZ.11.101: U$13.P$44
ZZ.11.102: U$13.P$74
ZZ.11.103: U$13.P$104
ZZ.11.104: U$13.P$134
ZZ.11.105: U$13.P$164
ZZ.11.106: U$13.P$43
ZZ.11.107: U$13.P$73
ZZ.11.108: U$13.P$103
ZZ.11.109: U$13.P$133
ZZ.11.110: U$13.P$163
ZZ.11.111: U$13.P$159
ZZ.11.112: U$15.P$45
ZZ.11.113: U$15.P$75
ZZ.11.114: U$15.P$105
ZZ.11.115: U$15.P$135
ZZ.11.116: U$15.P$165
ZZ.11.117: U$15.P$44
ZZ.11.118: U$15.P$74
ZZ.11.119: U$15.P$104
ZZ.11.120: U$15.P$134
ZZ.11.121: U$15.P$164
ZZ.11.122: U$15.P$43
ZZ.11.123: U$15.P$73
ZZ.11.124: U$15.P$103
ZZ.11.125: U$15.P$133
ZZ.11.126: U$15.P$163
ZZ.11.127: U$15.P$159
ZZ.12.000: U$1.P$48
ZZ.12.001: U$1.P$50
ZZ.12.002: U$1.P$52
ZZ.12.003: U$1.P$78
ZZ.12.004: U$1.P$80
ZZ.12.005: U$1.P$82
ZZ.12.006: U$1.P$108
ZZ.12.007: U$1.P$110
ZZ.12.008: U$1.P$112
ZZ.12.009: U$1.P$171
ZZ.12.010: U$1.P$138
ZZ.12.011: U$3.P$48
ZZ.12.012: U$3.P$50
ZZ.12.013: U$3.P$52
ZZ.12.014: U$1.P$142
ZZ.12.015: U$1.P$137
ZZ.12.016: U$3.P$78
ZZ.12.017: U$3.P$80
ZZ.12.018: U$3.P$82
ZZ.12.019: U$1.P$172
ZZ.12.020: U$1.P$166
ZZ.12.021: U$1.P$136
ZZ.12.022: U$3.P$108
ZZ.12.023: U$3.P$110
ZZ.12.024: U$3.P$112
ZZ.12.025: U$3.P$171
ZZ.12.026: U$3.P$138
ZZ.12.027: U$5.P$48
ZZ.12.028: U$5.P$50
ZZ.12.029: U$5.P$52
ZZ.12.030: U$3.P$142
ZZ.12.031: U$3.P$137
ZZ.12.032: U$3.P$172
ZZ.12.033: U$3.P$166
ZZ.12.034: U$3.P$136
ZZ.12.035: U$5.P$108
ZZ.12.036: U$5.P$110
ZZ.12.037: U$5.P$112
ZZ.12.038: U$5.P$78
ZZ.12.039: U$5.P$80
ZZ.12.040: U$5.P$82
ZZ.12.041: U$5.P$171
ZZ.12.042: U$5.P$138
ZZ.12.043: U$5.P$142
ZZ.12.044: U$5.P$137
ZZ.12.045: U$7.P$78
ZZ.12.046: U$5.P$172
ZZ.12.047: U$5.P$166
ZZ.12.048: U$5.P$136
ZZ.12.049: U$7.P$108
ZZ.12.050: U$7.P$110
ZZ.12.051: U$7.P$112
ZZ.12.052: U$7.P$80
ZZ.12.053: U$7.P$82
ZZ.12.054: U$7.P$48
ZZ.12.055: U$7.P$50
ZZ.12.056: U$7.P$52
ZZ.12.057: U$7.P$142
ZZ.12.058: U$7.P$137
ZZ.12.059: U$7.P$172
ZZ.12.060: U$7.P$166
ZZ.12.061: U$7.P$136
ZZ.12.062: U$9.P$108
ZZ.12.063: U$9.P$110
ZZ.12.064: U$9.P$112
ZZ.12.065: U$9.P$78
ZZ.12.066: U$9.P$80
ZZ.12.067: U$9.P$82
ZZ.12.068: U$7.P$171
ZZ.12.069: U$7.P$138
ZZ.12.070: U$9.P$48
ZZ.12.071: U$9.P$50
ZZ.12.072: U$9.P$52
ZZ.12.073: U$9.P$172
ZZ.12.074: U$9.P$166
ZZ.12.075: U$9.P$136
ZZ.12.076: U$11.P$108
ZZ.12.077: U$11.P$110
ZZ.12.078: U$11.P$112
ZZ.12.079: U$9.P$142
ZZ.12.080: U$9.P$137
ZZ.12.081: U$11.P$78
ZZ.12.082: U$11.P$80
ZZ.12.083: U$11.P$82
ZZ.12.084: U$9.P$171
ZZ.12.085: U$9.P$138